# Allegro board xm650_board_file.brd
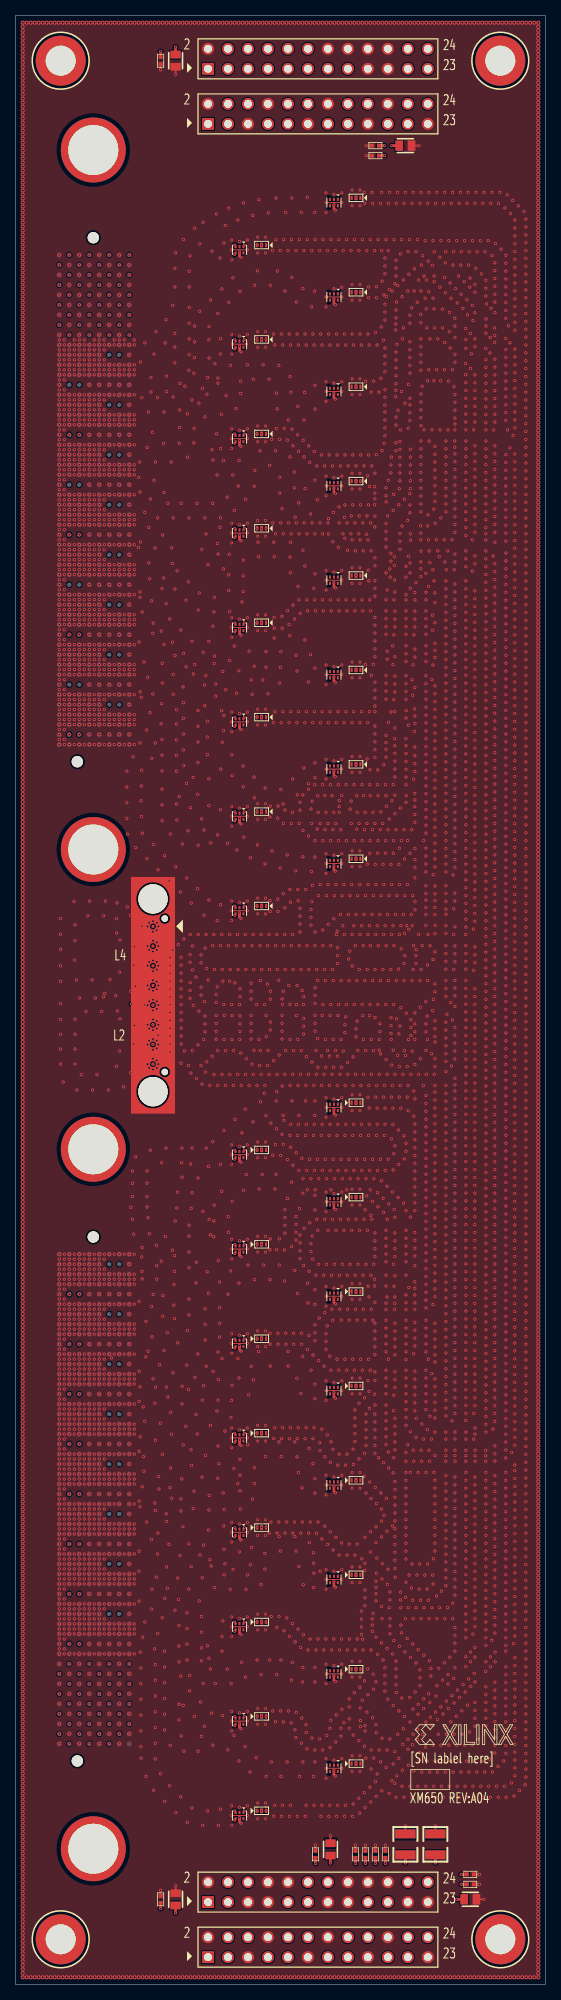
[diagram p0: board, top side]
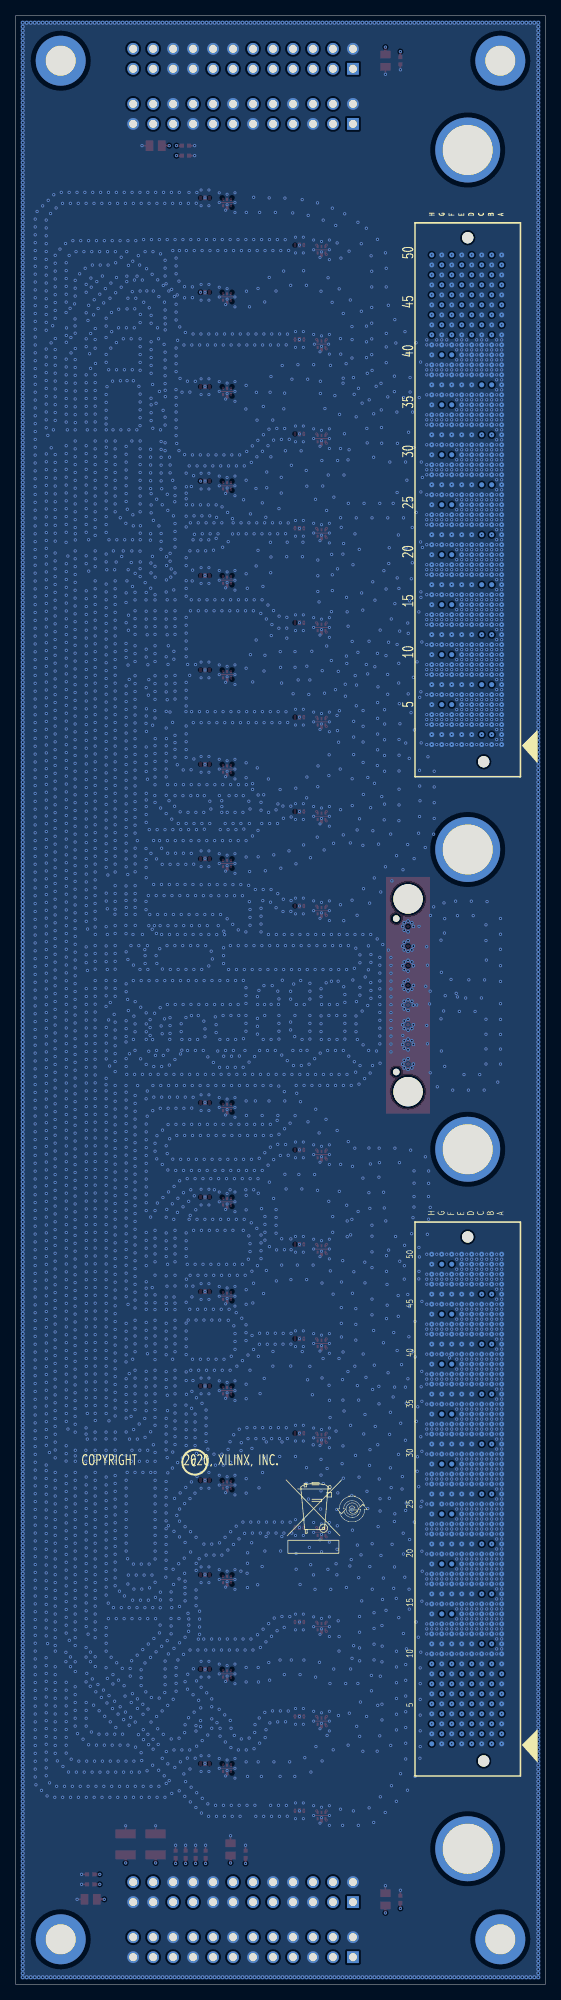
[diagram p1: board, bottom side, seen from below]

Outline 67.31 x 250.19 mm; copper layers: TOP, L02_RF_SIG, L03_GND, L04_RF_SIG, L05_GND, L06_PWR, L07_GND, L08_SIG, L09_GND, BOTTOM. Coordinates in mm from the lower left corner of the outline.
Outline path: 0,250.19 0,0 67.31,0 67.31,250.19 0,250.19

## Design rules (mm)
constraint set DEFAULT: min track width 0.318
net group TC_LAYER2_6INCH_: nets TC_LAYER2_6INCH_N TC_LAYER2_6INCH_P
net group TC_LAYER4_6INCH_: nets TC_LAYER4_6INCH_N TC_LAYER4_6INCH_P
net group ADC: nets ADC224_T0_CH0_P ADC224_T0_CH1_P ADC224_T0_CH2_P ADC224_T0_CH3_P ADC225_T1_CH0_P ADC225_T1_CH1_P ADC225_T1_CH2_P ADC225_T1_CH3_P ADC226_T2_CH0_P ADC226_T2_CH1_P ADC226_T2_CH2_P ADC226_T2_CH3_P ADC227_T3_CH0_P ADC227_T3_CH1_P ADC227_T3_CH2_P ADC227_T3_CH3_P
net group ADC_CH: nets ADC224_T0_CH0 ADC224_T0_CH1 ADC224_T0_CH2 ADC224_T0_CH3 ADC225_T1_CH0 ADC225_T1_CH1 ADC225_T1_CH2 ADC225_T1_CH3 ADC226_T2_CH0 ADC226_T2_CH1 ADC226_T2_CH2 ADC226_T2_CH3 ADC227_T3_CH0 ADC227_T3_CH1 ADC227_T3_CH2 ADC227_T3_CH3
net group ADC_DATA: nets ADC224_T0_CH0_N ADC224_T0_CH1_N ADC224_T0_CH2_N ADC224_T0_CH3_N ADC225_T1_CH0_N ADC225_T1_CH1_N ADC225_T1_CH2_N ADC225_T1_CH3_N ADC226_T2_CH0_N ADC226_T2_CH1_N ADC226_T2_CH2_N ADC226_T2_CH3_N ADC227_T3_CH0_N ADC227_T3_CH1_N ADC227_T3_CH2_N ADC227_T3_CH3_N
net group ADC_DIG: nets ADCIO_00 ADCIO_01 ADCIO_02 ADCIO_03 ADCIO_04 ADCIO_05 ADCIO_06 ADCIO_07 ADCIO_08 ADCIO_09 ADCIO_10 ADCIO_11 ADCIO_12 ADCIO_13 ADCIO_14 ADCIO_15 ADCIO_16 ADCIO_17 ADCIO_18 ADCIO_19
net group DAC: nets DAC228_T0_CH0_P DAC228_T0_CH1_P DAC228_T0_CH2_P DAC228_T0_CH3_P DAC229_T1_CH0_P DAC229_T1_CH1_P DAC229_T1_CH2_P DAC229_T1_CH3_P DAC230_T2_CH0_P DAC230_T2_CH1_P DAC230_T2_CH2_P DAC230_T2_CH3_P DAC231_T3_CH0_P DAC231_T3_CH1_P DAC231_T3_CH2_P DAC231_T3_CH3_P
net group DAC_DATA: nets DAC228_T0_CH0_N DAC228_T0_CH1_N DAC228_T0_CH2_N DAC228_T0_CH3_N DAC229_T1_CH0_N DAC229_T1_CH1_N DAC229_T1_CH2_N DAC229_T1_CH3_N DAC230_T2_CH0_N DAC230_T2_CH1_N DAC230_T2_CH2_N DAC230_T2_CH3_N DAC231_T3_CH0_N DAC231_T3_CH1_N DAC231_T3_CH2_N DAC231_T3_CH3_N
net group DAC_DIG: nets DACIO_00 DACIO_01 DACIO_02 DACIO_03 DACIO_04 DACIO_05 DACIO_06 DACIO_07 DACIO_08 DACIO_09 DACIO_10 DACIO_11 DACIO_12 DACIO_13 DACIO_14 DACIO_15 DACIO_16 DACIO_17 DACIO_18 DACIO_19

## Placement (name value [footprint] x y rotation side)
C25  10UF  [CAPC320X250X220]  49.53 17.78 90 top
C26  1UF  [CAPC100X50X60]  45.72 16.51 90 top
C27  1UF  [CAPC100X50X60]  44.45 16.51 90 top
C29  10UF  [CAPC200X125X155]  49.53 233.68 0 top
C30  1UF  [CAPC100X50X60]  45.72 233.68 180 top
C31  1UF  [CAPC100X50X60]  45.72 232.41 180 top
C32  10UF  [CAPC200X125X155]  20.32 244.47 270 top
C33  1UF  [CAPC100X50X60]  18.41 244.47 270 top
C34  10UF  [CAPC200X125X155]  20.32 10.79 90 top
C35  1UF  [CAPC100X50X60]  18.41 10.79 90 top
C36  10UF  [CAPC320X250X220]  53.34 17.78 90 top
C37  1UF  [CAPC100X50X60]  46.99 16.51 90 top
C38  1UF  [CAPC100X50X60]  43.18 16.51 90 top
C39  10UF  [CAPC200X125X155]  57.78 10.79 0 top
C40  1UF  [CAPC100X50X60]  57.78 12.7 0 top
C41  1UF  [CAPC100X50X60]  57.78 13.97 0 top
C42  10UF  [CAPC200X125X155]  40 17.14 90 top
C43  1UF  [CAPC100X50X60]  38.1 16.51 90 top
J21  -  [HDR_2X12]  24.44 236.44 0 top
J23  -  [HDR_2X12]  24.44 243.44 0 top
J44  -  [HDR_2X12]  24.44 3.45 0 top
J48  -  [HDR_2X12]  24.44 10.44 0 top
J49  -  [SAMTEC_LPAM_50_030_L_08_2_K_TR]  9.86 188.67 90 bottom
J50  -  [JSO_0415_01_PRESS_FIT]  9.86 144.22 0 top
J51  -  [JSO_0415_01_PRESS_FIT]  9.86 233.12 0 top
J52  -  [JSO_0415_01_PRESS_FIT]  9.86 17.22 0 top
J53  -  [JSO_0415_01_PRESS_FIT]  9.86 106.12 0 top
J55  -  [SAMTEC_LPAM_50_030_L_08_2_K_TR]  9.86 61.67 90 bottom
J56  COREHC2_8CH  [CON_CARLISE_COREH2C_8P]  17.44 134.44 270 top
MH1  MH_150_250  [MH_250H150]  5.71 244.47 0 top
MH2  MH_150_250  [MH_250H150]  61.59 244.47 0 top
MH3  MH_150_250  [MH_250H150]  61.59 5.71 0 top
MH4  MH_150_250  [MH_250H150]  5.71 5.71 0 top
NOREF  -  []  0 250.19 0 top
NOREF#2  -  []  67.31 0 90 top
NOREF#3  -  []  19.54 141.98 0 top
NOREF#4  -  []  655.72 288.7 0 top
U1  LFB184G70CT6F122  [FLTR_MURATA_LFB184G70CT6F122]  43.25 227.04 180 top
U2  LDB184G7BAAFA065  [BALUN_MURATA_LDB184G7BAAFA065]  40.44 226.44 270 top
U3  LFB184G70CT6F122  [FLTR_MURATA_LFB184G70CT6F122]  43.25 191.04 180 top
U4  LDB184G7BAAFA065  [BALUN_MURATA_LDB184G7BAAFA065]  40.44 190.44 270 top
U5  LFB184G70CT6F122  [FLTR_MURATA_LFB184G70CT6F122]  31.25 221.04 180 top
U6  LDB184G7BAAFA065  [BALUN_MURATA_LDB184G7BAAFA065]  28.44 220.44 270 top
U7  LFB184G70CT6F122  [FLTR_MURATA_LFB184G70CT6F122]  31.25 185.04 180 top
U8  LDB184G7BAAFA065  [BALUN_MURATA_LDB184G7BAAFA065]  28.44 184.44 270 top
U9  LFB184G70CT6F122  [FLTR_MURATA_LFB184G70CT6F122]  43.25 215.04 180 top
U10  LDB184G7BAAFA065  [BALUN_MURATA_LDB184G7BAAFA065]  40.44 214.44 270 top
U11  LFB184G70CT6F122  [FLTR_MURATA_LFB184G70CT6F122]  31.25 209.04 180 top
U12  LDB184G7BAAFA065  [BALUN_MURATA_LDB184G7BAAFA065]  28.44 208.44 270 top
U13  LFB184G70CT6F122  [FLTR_MURATA_LFB184G70CT6F122]  43.25 203.04 180 top
U14  LDB184G7BAAFA065  [BALUN_MURATA_LDB184G7BAAFA065]  40.44 202.44 270 top
U15  LFB184G70CT6F122  [FLTR_MURATA_LFB184G70CT6F122]  31.25 197.04 180 top
U16  LDB184G7BAAFA065  [BALUN_MURATA_LDB184G7BAAFA065]  28.44 196.44 270 top
U17  LFB184G70CT6F122  [FLTR_MURATA_LFB184G70CT6F122]  43.25 179.04 180 top
U18  LDB184G7BAAFA065  [BALUN_MURATA_LDB184G7BAAFA065]  40.44 178.44 270 top
U19  LFB184G70CT6F122  [FLTR_MURATA_LFB184G70CT6F122]  43.25 143.04 180 top
U20  LDB184G7BAAFA065  [BALUN_MURATA_LDB184G7BAAFA065]  40.44 142.44 270 top
U21  LFB184G70CT6F122  [FLTR_MURATA_LFB184G70CT6F122]  31.25 173.04 180 top
U22  LDB184G7BAAFA065  [BALUN_MURATA_LDB184G7BAAFA065]  28.44 172.44 270 top
U23  LFB184G70CT6F122  [FLTR_MURATA_LFB184G70CT6F122]  31.25 137.04 180 top
U24  LDB184G7BAAFA065  [BALUN_MURATA_LDB184G7BAAFA065]  28.44 136.44 270 top
U25  LFB184G70CT6F122  [FLTR_MURATA_LFB184G70CT6F122]  43.25 167.04 180 top
U26  LDB184G7BAAFA065  [BALUN_MURATA_LDB184G7BAAFA065]  40.44 166.44 270 top
U27  LFB184G70CT6F122  [FLTR_MURATA_LFB184G70CT6F122]  31.25 161.04 180 top
U28  LDB184G7BAAFA065  [BALUN_MURATA_LDB184G7BAAFA065]  28.44 160.44 270 top
U29  LFB184G70CT6F122  [FLTR_MURATA_LFB184G70CT6F122]  43.25 155.04 180 top
U30  LDB184G7BAAFA065  [BALUN_MURATA_LDB184G7BAAFA065]  40.44 154.44 270 top
U31  LFB184G70CT6F122  [FLTR_MURATA_LFB184G70CT6F122]  31.25 149.04 180 top
U32  LDB184G7BAAFA065  [BALUN_MURATA_LDB184G7BAAFA065]  28.44 148.44 270 top
U33  LFB184G70CT6F122  [FLTR_MURATA_LFB184G70CT6F122]  43.25 112.04 0 top
U34  LDB184G7BAAFA065  [BALUN_MURATA_LDB184G7BAAFA065]  40.44 111.44 270 top
U35  LFB184G70CT6F122  [FLTR_MURATA_LFB184G70CT6F122]  43.25 76.04 0 top
U36  LDB184G7BAAFA065  [BALUN_MURATA_LDB184G7BAAFA065]  40.44 75.44 270 top
U37  LFB184G70CT6F122  [FLTR_MURATA_LFB184G70CT6F122]  31.25 106.04 0 top
U38  LDB184G7BAAFA065  [BALUN_MURATA_LDB184G7BAAFA065]  28.44 105.44 270 top
U39  LFB184G70CT6F122  [FLTR_MURATA_LFB184G70CT6F122]  31.25 70.04 0 top
U40  LDB184G7BAAFA065  [BALUN_MURATA_LDB184G7BAAFA065]  28.44 69.44 270 top
U41  LFB184G70CT6F122  [FLTR_MURATA_LFB184G70CT6F122]  43.25 100.04 0 top
U42  LDB184G7BAAFA065  [BALUN_MURATA_LDB184G7BAAFA065]  40.44 99.44 270 top
U43  LFB184G70CT6F122  [FLTR_MURATA_LFB184G70CT6F122]  31.25 94.04 0 top
U44  LDB184G7BAAFA065  [BALUN_MURATA_LDB184G7BAAFA065]  28.44 93.44 270 top
U45  LFB184G70CT6F122  [FLTR_MURATA_LFB184G70CT6F122]  43.25 88.04 0 top
U46  LDB184G7BAAFA065  [BALUN_MURATA_LDB184G7BAAFA065]  40.44 87.44 270 top
U47  LFB184G70CT6F122  [FLTR_MURATA_LFB184G70CT6F122]  31.25 82.04 0 top
U48  LDB184G7BAAFA065  [BALUN_MURATA_LDB184G7BAAFA065]  28.44 81.44 270 top
U49  LFB184G70CT6F122  [FLTR_MURATA_LFB184G70CT6F122]  43.25 64.04 0 top
U50  LDB184G7BAAFA065  [BALUN_MURATA_LDB184G7BAAFA065]  40.44 63.44 270 top
U51  LFB184G70CT6F122  [FLTR_MURATA_LFB184G70CT6F122]  43.25 28.04 0 top
U52  LDB184G7BAAFA065  [BALUN_MURATA_LDB184G7BAAFA065]  40.44 27.44 270 top
U53  LFB184G70CT6F122  [FLTR_MURATA_LFB184G70CT6F122]  31.25 58.04 0 top
U54  LDB184G7BAAFA065  [BALUN_MURATA_LDB184G7BAAFA065]  28.44 57.44 270 top
U55  LFB184G70CT6F122  [FLTR_MURATA_LFB184G70CT6F122]  31.25 22.04 0 top
U56  LDB184G7BAAFA065  [BALUN_MURATA_LDB184G7BAAFA065]  28.44 21.44 270 top
U57  LFB184G70CT6F122  [FLTR_MURATA_LFB184G70CT6F122]  43.25 52.04 0 top
U58  LDB184G7BAAFA065  [BALUN_MURATA_LDB184G7BAAFA065]  40.44 51.44 270 top
U59  LFB184G70CT6F122  [FLTR_MURATA_LFB184G70CT6F122]  31.25 46.04 0 top
U60  LDB184G7BAAFA065  [BALUN_MURATA_LDB184G7BAAFA065]  28.44 45.44 270 top
U61  LFB184G70CT6F122  [FLTR_MURATA_LFB184G70CT6F122]  31.25 34.04 0 top
U62  LDB184G7BAAFA065  [BALUN_MURATA_LDB184G7BAAFA065]  28.44 33.44 270 top
U63  LFB184G70CT6F122  [FLTR_MURATA_LFB184G70CT6F122]  43.25 40.04 0 top
U64  LDB184G7BAAFA065  [BALUN_MURATA_LDB184G7BAAFA065]  40.44 39.44 270 top

## Library data of the parts
C25 = CAP_NP: alternate symbols: (CAPC320X250X220RND); signal model: CAP_NP_CAPC60X30X40_0.1UF_CAPC60X30X40RND_0.1UF
C26 C27 C31 C37 C40 = CAP_NP: alternate symbols: (CAPC100X50X60RND); signal model: DEFAULT_CAPACITOR_100000pF_2_1
C29 C32 C34 C39 = CAP_NP: alternate symbols: (CAPC200X125X155RND)
C30 C33 C35 C38 = CAP_NP: alternate symbols: (CAPC100X50X60RND)
C36 = CAP_NP: alternate symbols: (CAPC320X250X220RND)
C41 = CAP_NP: alternate symbols: (CAPC100X50X60RND); signal model: DEFAULT_CAPACITOR_1e+06pF_2_1
C42 = CAP_NP: alternate symbols: (CAPC200X125X155RND); signal model: DEFAULT_CAPACITOR_100000pF_2_1
C43 = CAP_NP: alternate symbols: (CAPC100X50X60RND); signal model: DEFAULT_CAPACITOR_1000pF_2_1
J21 J23 J44 J48 = HDR_2X12
J49 J55 = LPAM-50-01.0-L-08-2-K-TR
J50-J53 = HOLE_JSO
J56 = COREHC2_8CH
MH1-MH4 = HOLE
U1 U3 U5 U7 U9 U11 U13 U15 U17 U19 U21 U23 U25 U27 U29 U31 U33 U35 U37 U39 U41 U43 U45 U47 U49 U51 U53 U55 U57 U59 U61 U63 = BP_FILTER
U2 U4 U6 U8 U10 U12 U14 U16 U18 U20 U22 U24 U26 U28 U30 U32 U34 U36 U38 U40 U42 U44 U46 U48 U50 U52 U54 U56 U58 U60 U62 U64 = LDB184G7BAAFA065

## Footprints (pads in the part's own frame, mm; a bottom-side part is the same pattern mirrored in y, then rotated)
BALUN_MURATA_LDB184G7BAAFA065
  rect 0.4x0.25 smd: 1(-0.4,0.5) 2(-0.4,0) 3(-0.4,-0.5) 4(0.4,-0.5) 5(0.4,0) 6(0.4,0.5)
CAPC100X50X60
  rect 0.5x0.51 smd: 1(-0.45,0) 2(0.45,0)
CAPC200X125X155
  rect 0.98x1.32 smd: 1(-0.78,0) 2(0.78,0)
CAPC320X250X220
  rect 1.145x2.59 smd: 1(-1.333,0) 2(1.333,0)
CON_CARLISE_COREH2C_8P
  round 3.734 hole 3.734 unplated: (-3.5,0) (21,0)
  round 0.838 hole 0.838 unplated: (-1,1.5) (18.5,1.5)
  round 0.406 smd: 1(0,0) 2(2.5,0) 3(5,0) 4(7.5,0) 5(10,0) 6(12.5,0) 7(15,0) 8(17.5,0)
  round 0.1 smd: 9(1.25,1.25) 10(16.25,1.25)
FLTR_MURATA_LFB184G70CT6F122
  rect 0.28x0.55 smd: 1(-0.56,0) 3(0.56,0)
  rect 0.4x0.6 smd: 2(0,0)
HDR_2X12
  rect 1.5x1.5 hole 1.016: 1(0,0)
  round 1.5 hole 1.016: 2(0,2.54) 3(2.54,0) 4(2.54,2.54) 5(5.08,0) 6(5.08,2.54) 7(7.62,0) 8(7.62,2.54) 9(10.16,0) 10(10.16,2.54) 11(12.7,0) 12(12.7,2.54) 13(15.24,0) 14(15.24,2.54) 15(17.78,0) 16(17.78,2.54) 17(20.32,0) 18(20.32,2.54) 19(22.86,0) 20(22.86,2.54) 21(25.4,0) 22(25.4,2.54) 23(27.94,0) 24(27.94,2.54)
JSO_0415_01_PRESS_FIT
  round 8.255 hole 6.35: 1(0,0)
MH_250H150
  round 6.35 hole 3.81: 1(0,0)
SAMTEC_LPAM_50_030_L_08_2_K_TR
  round 1.44 hole 1.448 unplated: (-33.295,-2.03) (33.305,0)
  round 0.64 smd: A1(-31.115,-4.32) A2(-29.845,-4.32) A3(-28.575,-4.32) A4(-27.305,-4.32) A5(-26.035,-4.32) A6(-24.765,-4.32) A7(-23.495,-4.32) A8(-22.225,-4.32) A9(-20.955,-4.32) A10(-19.685,-4.32) A11(-18.415,-4.32) A12(-17.145,-4.32) A13(-15.875,-4.32) A14(-14.605,-4.32) A15(-13.335,-4.32) A16(-12.065,-4.32) A17(-10.795,-4.32) A18(-9.525,-4.32) A19(-8.255,-4.32) A20(-6.985,-4.32) A21(-5.715,-4.32) A22(-4.445,-4.32) A23(-3.175,-4.32) A24(-1.905,-4.32) A25(-0.635,-4.32) A26(0.635,-4.32) A27(1.905,-4.32) A28(3.175,-4.32) A29(4.445,-4.32) A30(5.715,-4.32) A31(6.985,-4.32) A32(8.255,-4.32) A33(9.525,-4.32) A34(10.795,-4.32) A35(12.065,-4.32) A36(13.335,-4.32) A37(14.605,-4.32) A38(15.875,-4.32) A39(17.145,-4.32) A40(18.415,-4.32) A41(19.685,-4.32) A42(20.955,-4.32) A43(22.225,-4.32) A44(23.495,-4.32) A45(24.765,-4.32) A46(26.035,-4.32) A47(27.305,-4.32) A48(28.575,-4.32) A49(29.845,-4.32) A50(31.115,-4.32) B1(-31.115,-3.05) B2(-29.845,-3.05) B3(-28.575,-3.05) B4(-27.305,-3.05) B5(-26.035,-3.05) B6(-24.765,-3.05) B7(-23.495,-3.05) B8(-22.225,-3.05) B9(-20.955,-3.05) B10(-19.685,-3.05) B11(-18.415,-3.05) B12(-17.145,-3.05) B13(-15.875,-3.05) B14(-14.605,-3.05) B15(-13.335,-3.05) B16(-12.065,-3.05) B17(-10.795,-3.05) B18(-9.525,-3.05) B19(-8.255,-3.05) B20(-6.985,-3.05) B21(-5.715,-3.05) B22(-4.445,-3.05) B23(-3.175,-3.05) B24(-1.905,-3.05) B25(-0.635,-3.05) B26(0.635,-3.05) B27(1.905,-3.05) B28(3.175,-3.05) B29(4.445,-3.05) B30(5.715,-3.05) B31(6.985,-3.05) B32(8.255,-3.05) B33(9.525,-3.05) B34(10.795,-3.05) B35(12.065,-3.05) B36(13.335,-3.05) B37(14.605,-3.05) B38(15.875,-3.05) B39(17.145,-3.05) B40(18.415,-3.05) B41(19.685,-3.05) B42(20.955,-3.05) B43(22.225,-3.05) B44(23.495,-3.05) B45(24.765,-3.05) B46(26.035,-3.05) B47(27.305,-3.05) B48(28.575,-3.05) B49(29.845,-3.05) B50(31.115,-3.05) C1(-31.115,-1.78) C2(-29.845,-1.78) C3(-28.575,-1.78) C4(-27.305,-1.78) C5(-26.035,-1.78) C6(-24.765,-1.78) C7(-23.495,-1.78) C8(-22.225,-1.78) C9(-20.955,-1.78) C10(-19.685,-1.78) C11(-18.415,-1.78) C12(-17.145,-1.78) C13(-15.875,-1.78) C14(-14.605,-1.78) C15(-13.335,-1.78) C16(-12.065,-1.78) C17(-10.795,-1.78) C18(-9.525,-1.78) C19(-8.255,-1.78) C20(-6.985,-1.78) C21(-5.715,-1.78) C22(-4.445,-1.78) C23(-3.175,-1.78) C24(-1.905,-1.78) C25(-0.635,-1.78) C26(0.635,-1.78) C27(1.905,-1.78) C28(3.175,-1.78) C29(4.445,-1.78) C30(5.715,-1.78) C31(6.985,-1.78) C32(8.255,-1.78) C33(9.525,-1.78) C34(10.795,-1.78) C35(12.065,-1.78) C36(13.335,-1.78) C37(14.605,-1.78) C38(15.875,-1.78) C39(17.145,-1.78) C40(18.415,-1.78) C41(19.685,-1.78) C42(20.955,-1.78) C43(22.225,-1.78) C44(23.495,-1.78) C45(24.765,-1.78) C46(26.035,-1.78) C47(27.305,-1.78) C48(28.575,-1.78) C49(29.845,-1.78) C50(31.115,-1.78) D1(-31.115,-0.51) D2(-29.845,-0.51) D3(-28.575,-0.51) D4(-27.305,-0.51) D5(-26.035,-0.51) D6(-24.765,-0.51) D7(-23.495,-0.51) D8(-22.225,-0.51) D9(-20.955,-0.51) D10(-19.685,-0.51) D11(-18.415,-0.51) D12(-17.145,-0.51) D13(-15.875,-0.51) D14(-14.605,-0.51) D15(-13.335,-0.51) D16(-12.065,-0.51) D17(-10.795,-0.51) D18(-9.525,-0.51) D19(-8.255,-0.51) D20(-6.985,-0.51) D21(-5.715,-0.51) D22(-4.445,-0.51) D23(-3.175,-0.51) D24(-1.905,-0.51) D25(-0.635,-0.51) D26(0.635,-0.51) D27(1.905,-0.51) D28(3.175,-0.51) D29(4.445,-0.51) D30(5.715,-0.51) D31(6.985,-0.51) D32(8.255,-0.51) D33(9.525,-0.51) D34(10.795,-0.51) D35(12.065,-0.51) D36(13.335,-0.51) D37(14.605,-0.51) D38(15.875,-0.51) D39(17.145,-0.51) D40(18.415,-0.51) D41(19.685,-0.51) D42(20.955,-0.51) D43(22.225,-0.51) D44(23.495,-0.51) D45(24.765,-0.51) D46(26.035,-0.51) D47(27.305,-0.51) D48(28.575,-0.51) D49(29.845,-0.51) D50(31.115,-0.51) E1(-31.115,0.76) E2(-29.845,0.76) E3(-28.575,0.76) E4(-27.305,0.76) E5(-26.035,0.76) E6(-24.765,0.76) E7(-23.495,0.76) E8(-22.225,0.76) E9(-20.955,0.76) E10(-19.685,0.76) E11(-18.415,0.76) E12(-17.145,0.76) E13(-15.875,0.76) E14(-14.605,0.76) E15(-13.335,0.76) E16(-12.065,0.76) E17(-10.795,0.76) E18(-9.525,0.76) E19(-8.255,0.76) E20(-6.985,0.76) E21(-5.715,0.76) E22(-4.445,0.76) E23(-3.175,0.76) E24(-1.905,0.76) E25(-0.635,0.76) E26(0.635,0.76) E27(1.905,0.76) E28(3.175,0.76) E29(4.445,0.76) E30(5.715,0.76) E31(6.985,0.76) E32(8.255,0.76) E33(9.525,0.76) E34(10.795,0.76) E35(12.065,0.76) E36(13.335,0.76) E37(14.605,0.76) E38(15.875,0.76) E39(17.145,0.76) E40(18.415,0.76) E41(19.685,0.76) E42(20.955,0.76) E43(22.225,0.76) E44(23.495,0.76) E45(24.765,0.76) E46(26.035,0.76) E47(27.305,0.76) E48(28.575,0.76) E49(29.845,0.76) E50(31.115,0.76) F1(-31.115,2.03) F2(-29.845,2.03) F3(-28.575,2.03) F4(-27.305,2.03) F5(-26.035,2.03) F6(-24.765,2.03) F7(-23.495,2.03) F8(-22.225,2.03) F9(-20.955,2.03) F10(-19.685,2.03) F11(-18.415,2.03) F12(-17.145,2.03) F13(-15.875,2.03) F14(-14.605,2.03) F15(-13.335,2.03) F16(-12.065,2.03) F17(-10.795,2.03) F18(-9.525,2.03) F19(-8.255,2.03) F20(-6.985,2.03) F21(-5.715,2.03) F22(-4.445,2.03) F23(-3.175,2.03) F24(-1.905,2.03) F25(-0.635,2.03) F26(0.635,2.03) F27(1.905,2.03) F28(3.175,2.03) F29(4.445,2.03) F30(5.715,2.03) F31(6.985,2.03) F32(8.255,2.03) F33(9.525,2.03) F34(10.795,2.03) F35(12.065,2.03) F36(13.335,2.03) F37(14.605,2.03) F38(15.875,2.03) F39(17.145,2.03) F40(18.415,2.03) F41(19.685,2.03) F42(20.955,2.03) F43(22.225,2.03) F44(23.495,2.03) F45(24.765,2.03) F46(26.035,2.03) F47(27.305,2.03) F48(28.575,2.03) F49(29.845,2.03) F50(31.115,2.03) G1(-31.115,3.3) G2(-29.845,3.3) G3(-28.575,3.3) G4(-27.305,3.3) G5(-26.035,3.3) G6(-24.765,3.3) G7(-23.495,3.3) G8(-22.225,3.3) G9(-20.955,3.3) G10(-19.685,3.3) G11(-18.415,3.3) G12(-17.145,3.3) G13(-15.875,3.3) G14(-14.605,3.3) G15(-13.335,3.3) G16(-12.065,3.3) G17(-10.795,3.3) G18(-9.525,3.3) G19(-8.255,3.3) G20(-6.985,3.3) G21(-5.715,3.3) G22(-4.445,3.3) G23(-3.175,3.3) G24(-1.905,3.3) G25(-0.635,3.3) G26(0.635,3.3) G27(1.905,3.3) G28(3.175,3.3) G29(4.445,3.3) G30(5.715,3.3) G31(6.985,3.3) G32(8.255,3.3) G33(9.525,3.3) G34(10.795,3.3) G35(12.065,3.3) G36(13.335,3.3) G37(14.605,3.3) G38(15.875,3.3) G39(17.145,3.3) G40(18.415,3.3) G41(19.685,3.3) G42(20.955,3.3) G43(22.225,3.3) G44(23.495,3.3) G45(24.765,3.3) G46(26.035,3.3) G47(27.305,3.3) G48(28.575,3.3) G49(29.845,3.3) G50(31.115,3.3) H1(-31.115,4.57) H2(-29.845,4.57) H3(-28.575,4.57) H4(-27.305,4.57) H5(-26.035,4.57) H6(-24.765,4.57) H7(-23.495,4.57) H8(-22.225,4.57) H9(-20.955,4.57) H10(-19.685,4.57) H11(-18.415,4.57) H12(-17.145,4.57) H13(-15.875,4.57) H14(-14.605,4.57) H15(-13.335,4.57) H16(-12.065,4.57) H17(-10.795,4.57) H18(-9.525,4.57) H19(-8.255,4.57) H20(-6.985,4.57) H21(-5.715,4.57) H22(-4.445,4.57) H23(-3.175,4.57) H24(-1.905,4.57) H25(-0.635,4.57) H26(0.635,4.57) H27(1.905,4.57) H28(3.175,4.57) H29(4.445,4.57) H30(5.715,4.57) H31(6.985,4.57) H32(8.255,4.57) H33(9.525,4.57) H34(10.795,4.57) H35(12.065,4.57) H36(13.335,4.57) H37(14.605,4.57) H38(15.875,4.57) H39(17.145,4.57) H40(18.415,4.57) H41(19.685,4.57) H42(20.955,4.57) H43(22.225,4.57) H44(23.495,4.57) H45(24.765,4.57) H46(26.035,4.57) H47(27.305,4.57) H48(28.575,4.57) H49(29.845,4.57) H50(31.115,4.57)

## Nets
GND: C25.2 C26.2 C27.2 C29.2 C30.2 C31.2 C32.2 C33.2 C34.2 C35.2 C36.2 C37.2 C38.2 C39.2 C40.2 C41.2 C42.2 C43.2 J21.2 J21.5 J21.8 J21.11 J21.14 J21.17 J21.20 J21.23 J23.2 J23.14 J23.16 J23.17 J23.18 J23.19 J23.20 J44.2 J44.5 J44.8 J44.11 J44.14 J44.17 J44.20 J44.23 J48.2 J48.5 J48.7 J48.8 J48.10 J48.13 J48.15 J48.16 J48.18 J48.20 J48.21 J48.23 J49.A1 J49.A2 J49.A3 J49.A4 J49.A5 J49.A6 J49.A7 J49.A8 J49.A9 J49.A10 J49.A11 J49.A12 J49.A13 J49.A14 J49.A15 J49.A16 J49.A17 J49.A18 J49.A19 J49.A20 J49.A21 J49.A22 J49.A23 J49.A24 J49.A25 J49.A26 J49.A27 J49.A28 J49.A29 J49.A30 J49.A31 J49.A32 J49.A33 J49.A34 J49.A35 J49.A36 J49.A37 J49.A38 J49.A39 J49.A40 J49.A41 J49.A42 J49.A44 J49.A46 J49.A48 J49.A50 J49.B1 J49.B3 J49.B4 J49.B5 J49.B6 J49.B8 J49.B9 J49.B10 J49.B11 J49.B13 J49.B14 J49.B15 J49.B16 J49.B18 J49.B19 J49.B20 J49.B21 J49.B23 J49.B24 J49.B25 J49.B26 J49.B28 J49.B29 J49.B30 J49.B31 J49.B33 J49.B34 J49.B35 J49.B36 J49.B38 J49.B39 J49.B40 J49.B41 J49.B43 J49.B45 J49.B47 J49.B49 J49.C1 J49.C3 J49.C4 J49.C5 J49.C6 J49.C8 J49.C9 J49.C10 J49.C11 J49.C13 J49.C14 J49.C15 J49.C16 J49.C18 J49.C19 J49.C20 J49.C21 J49.C23 J49.C24 J49.C25 J49.C26 J49.C28 J49.C29 J49.C30 J49.C31 J49.C33 J49.C34 J49.C35 J49.C36 J49.C38 J49.C39 J49.C40 J49.C41 J49.C42 J49.C44 J49.C46 J49.C48 J49.C50 J49.D1 J49.D2 J49.D3 J49.D4 J49.D5 J49.D6 J49.D7 J49.D8 J49.D9 J49.D10 J49.D11 J49.D12 J49.D13 J49.D14 J49.D15 J49.D16 J49.D17 J49.D18 J49.D19 J49.D20 J49.D21 J49.D22 J49.D23 J49.D24 J49.D25 J49.D26 J49.D27 J49.D28 J49.D29 J49.D30 J49.D31 J49.D32 J49.D33 J49.D34 J49.D35 J49.D36 J49.D37 J49.D38 J49.D39 J49.D40 J49.D41 J49.D43 J49.D45 J49.D47 J49.D49 J49.E1 J49.E2 J49.E3 J49.E4 J49.E5 J49.E6 J49.E7 J49.E8 J49.E9 J49.E10 J49.E11 J49.E12 J49.E13 J49.E14 J49.E15 J49.E16 J49.E17 J49.E18 J49.E19 J49.E20 J49.E21 J49.E22 J49.E23 J49.E24 J49.E25 J49.E26 J49.E27 J49.E28 J49.E29 J49.E30 J49.E31 J49.E32 J49.E33 J49.E34 J49.E35 J49.E36 J49.E37 J49.E38 J49.E39 J49.E40 J49.E41 J49.E42 J49.E44 J49.E46 J49.E48 J49.E50 J49.F1 J49.F2 J49.F3 J49.F4 J49.F6 J49.F7 J49.F8 J49.F9 J49.F11 J49.F12 J49.F13 J49.F14 J49.F16 J49.F17 J49.F18 J49.F19 J49.F21 J49.F22 J49.F23 J49.F24 J49.F26 J49.F27 J49.F28 J49.F29 J49.F31 J49.F32 J49.F33 J49.F34 J49.F36 J49.F37 J49.F38 J49.F39 J49.F41 J49.F43 J49.F45 J49.F47 J49.F49 J49.G1 J49.G2 J49.G3 J49.G4 J49.G6 J49.G7 J49.G8 J49.G9 J49.G11 J49.G12 J49.G13 J49.G14 J49.G16 J49.G17 J49.G18 J49.G19 J49.G21 J49.G22 J49.G23 J49.G24 J49.G26 J49.G27 J49.G28 J49.G29 J49.G31 J49.G32 J49.G33 J49.G34 J49.G36 J49.G37 J49.G38 J49.G39 J49.G41 J49.G42 J49.G44 J49.G46 J49.G48 J49.G50 J49.H1 J49.H2 J49.H3 J49.H4 J49.H5 J49.H6 J49.H7 J49.H8 J49.H9(9) J49.H10 J49.H11 J49.H12 J49.H13 J49.H14 J49.H15 J49.H16 J49.H17 J49.H18 J49.H19 J49.H20 J49.H21 J49.H22 J49.H23 J49.H24 J49.H25 J49.H26 J49.H27 J49.H28 J49.H29 J49.H30 J49.H31 J49.H32 J49.H33 J49.H34 J49.H35 J49.H36 J49.H37 J49.H38 J49.H39 J49.H40 J49.H41 J49.H43 J49.H45 J49.H47 J49.H49 J55.A1 J55.A3 J55.A5 J55.A7 J55.A9 J55.A10 J55.A11 J55.A12 J55.A13 J55.A14 J55.A15 J55.A16 J55.A17 J55.A18 J55.A19 J55.A20 J55.A21 J55.A22 J55.A23 J55.A24 J55.A25 J55.A26 J55.A27 J55.A28 J55.A29 J55.A30 J55.A31 J55.A32 J55.A33 J55.A34 J55.A35 J55.A36 J55.A37 J55.A38 J55.A39 J55.A40 J55.A41 J55.A42 J55.A43 J55.A44 J55.A45 J55.A46 J55.A47 J55.A48 J55.A49 J55.A50 J55.B2 J55.B4 J55.B6 J55.B8 J55.B10 J55.B12 J55.B13 J55.B14 J55.B15 J55.B17 J55.B18 J55.B19 J55.B20 J55.B22 J55.B23 J55.B24 J55.B25 J55.B27 J55.B28 J55.B29 J55.B30 J55.B32 J55.B33 J55.B34 J55.B35 J55.B37 J55.B38 J55.B39 J55.B40 J55.B42 J55.B43 J55.B44 J55.B45 J55.B47 J55.B48 J55.B49 J55.B50 J55.C1 J55.C3 J55.C5 J55.C7 J55.C9 J55.C10 J55.C12 J55.C13 J55.C14 J55.C15 J55.C17 J55.C18 J55.C19 J55.C20 J55.C22 J55.C23 J55.C24 J55.C25 J55.C27 J55.C28 J55.C29 J55.C30 J55.C32 J55.C33 J55.C34 J55.C35 J55.C37 J55.C38 J55.C39 J55.C40 J55.C42 J55.C43 J55.C44 J55.C45 J55.C47 J55.C48 J55.C49 J55.C50 J55.D2 J55.D4 J55.D6 J55.D8 J55.D10 J55.D11 J55.D12 J55.D13 J55.D14 J55.D15 J55.D16 J55.D17 J55.D18 J55.D19 J55.D20 J55.D21 J55.D22 J55.D23 J55.D24 J55.D25 J55.D26 J55.D27 J55.D28 J55.D29 J55.D30 J55.D31 J55.D32 J55.D33 J55.D34 J55.D35 J55.D36 J55.D37 J55.D38 J55.D39 J55.D40 J55.D41 J55.D42 J55.D43 J55.D44 J55.D45 J55.D46 J55.D47 J55.D48 J55.D49 J55.D50 J55.E1 J55.E3 J55.E5 J55.E7 J55.E9 J55.E10 J55.E11 J55.E12 J55.E13 J55.E14 J55.E15 J55.E16 J55.E17 J55.E18 J55.E19 J55.E20 J55.E21 J55.E22 J55.E23 J55.E24 J55.E25 J55.E26 J55.E27 J55.E28 J55.E29 J55.E30 J55.E31 J55.E32 J55.E33 J55.E34 J55.E35 J55.E36 J55.E37 J55.E38 J55.E39 J55.E40 J55.E41 J55.E42 J55.E43 J55.E44 J55.E45 J55.E46 J55.E47 J55.E48 J55.E49 J55.E50 J55.F2 J55.F4 J55.F6 J55.F8 J55.F10 J55.F11 J55.F12 J55.F13 J55.F15 J55.F16 J55.F17 J55.F18 J55.F20 J55.F21 J55.F22 J55.F23 J55.F25 J55.F26 J55.F27 J55.F28 J55.F30 J55.F31 J55.F32 J55.F33 J55.F35 J55.F36 J55.F37 J55.F38 J55.F40 J55.F41 J55.F42 J55.F43 J55.F45 J55.F46 J55.F47 J55.F48 J55.F50 J55.G1 J55.G3 J55.G5 J55.G7 J55.G9 J55.G10 J55.G11 J55.G12 J55.G13 J55.G15 J55.G16 J55.G17 J55.G18 J55.G20 J55.G21 J55.G22 J55.G23 J55.G25 J55.G26 J55.G27 J55.G28 J55.G30 J55.G31 J55.G32 J55.G33 J55.G35 J55.G36 J55.G37 J55.G38 J55.G40 J55.G41 J55.G42 J55.G43 J55.G45 J55.G46 J55.G47 J55.G48 J55.G50 J55.H2 J55.H4 J55.H6 J55.H8 J55.H10 J55.H11 J55.H12 J55.H13 J55.H14 J55.H15 J55.H16 J55.H17 J55.H18 J55.H19 J55.H20 J55.H21 J55.H22 J55.H23 J55.H24 J55.H25 J55.H26 J55.H27 J55.H28 J55.H29 J55.H30 J55.H31 J55.H32 J55.H33 J55.H34 J55.H35 J55.H36 J55.H37 J55.H38 J55.H39 J55.H40 J55.H41 J55.H42 J55.H43 J55.H44 J55.H45 J55.H46 J55.H47 J55.H48 J55.H49 J55.H50 J56.9 J56.10 U1.2 U2.5 U3.2 U4.5 U5.2 U6.5 U7.2 U8.5 U9.2 U10.5 U11.2 U12.5 U13.2 U14.5 U15.2 U16.5 U17.2 U18.5 U19.2 U20.5 U21.2 U22.5 U23.2 U24.5 U25.2 U26.5 U27.2 U28.5 U29.2 U30.5 U31.2 U32.5 U33.2 U34.5 U35.2 U36.5 U37.2 U38.5 U39.2 U40.5 U41.2 U42.5 U43.2 U44.5 U45.2 U46.5 U47.2 U48.5 U49.2 U50.5 U51.2 U52.5 U53.2 U54.5 U55.2 U56.5 U57.2 U58.5 U59.2 U60.5 U61.2 U62.5 U63.2 U64.5
VCC12_SW: C25.1 C26.1 C27.1 C36.1 C37.1 C38.1 J48.22 J48.24 J55.A6 J55.B7 J55.C6 J55.D7 J55.E6 J55.F7 J55.G6 J55.H7
ADC224_T0_CH0: U1.1 U51.3(OUT)
ADC224_T0_CH0_N: J49.F40 U2.4(Q2)
ADC224_T0_CH0_P: J49.G40 U2.3
ADC224_T0_CH1: U5.1 U55.3(OUT)
ADC224_T0_CH1_N: J49.B37 U6.4(Q2)
ADC224_T0_CH1_P: J49.C37 U6.3
ADC224_T0_CH2: U9.1 U63.3(OUT)
ADC224_T0_CH2_N: J49.F35 U10.4(Q2)
ADC224_T0_CH2_P: J49.G35 U10.3
ADC224_T0_CH3: U11.1 U61.3(OUT)
ADC224_T0_CH3_N: J49.B32 U12.4(Q2)
ADC224_T0_CH3_P: J49.C32 U12.3
ADC225_T1_CH0: U13.1 U57.3(OUT)
ADC225_T1_CH0_N: J49.F30 U14.4(Q2)
ADC225_T1_CH0_P: J49.G30 U14.3
ADC225_T1_CH1: U15.1 U59.3(OUT)
ADC225_T1_CH1_N: J49.B27 U16.4(Q2)
ADC225_T1_CH1_P: J49.C27 U16.3
ADC225_T1_CH2: U3.1 U49.3(OUT)
ADC225_T1_CH2_N: J49.F25 U4.4(Q2)
ADC225_T1_CH2_P: J49.G25 U4.3
ADC225_T1_CH3: U7.1 U53.3(OUT)
ADC225_T1_CH3_N: J49.B22 U8.4(Q2)
ADC225_T1_CH3_P: J49.C22 U8.3
ADC226_T2_CH0: U17.1 U35.3(OUT)
ADC226_T2_CH0_N: J49.F20 U18.4(Q2)
ADC226_T2_CH0_P: J49.G20 U18.3
ADC226_T2_CH1: U21.1 U39.3(OUT)
ADC226_T2_CH1_N: J49.B17 U22.4(Q2)
ADC226_T2_CH1_P: J49.C17 U22.3
ADC226_T2_CH2: U25.1 U45.3(OUT)
ADC226_T2_CH2_N: J49.F15 U26.4(Q2)
ADC226_T2_CH2_P: J49.G15 U26.3
ADC226_T2_CH3: U27.1 U47.3(OUT)
ADC226_T2_CH3_N: J49.B12 U28.4(Q2)
ADC226_T2_CH3_P: J49.C12 U28.3
ADC227_T3_CH0: U29.1 U41.3(OUT)
ADC227_T3_CH0_N: J49.F10 U30.4(Q2)
ADC227_T3_CH0_P: J49.G10 U30.3
ADC227_T3_CH1: U31.1 U43.3(OUT)
ADC227_T3_CH1_N: J49.B7 U32.4(Q2)
ADC227_T3_CH1_P: J49.C7 U32.3
ADC227_T3_CH2: U19.1 U33.3(OUT)
ADC227_T3_CH2_N: J49.F5 U20.4(Q2)
ADC227_T3_CH2_P: J49.G5 U20.3
ADC227_T3_CH3: U23.1 U37.3(OUT)
ADC227_T3_CH3_N: J49.B2 U24.4(Q2)
ADC227_T3_CH3_P: J49.C2 U24.3
ADCIO_00: J21.1 J49.A47
ADCIO_01: J21.3 J49.A49
ADCIO_02: J21.7 J49.B46
ADCIO_03: J21.9(P9) J49.B48
ADCIO_04: J21.13 J49.C47
ADCIO_05: J21.15 J49.C49
ADCIO_06: J21.19 J49.D46
ADCIO_07: J21.21 J49.D48
ADCIO_08: J23.1 J49.E47
ADCIO_09: J23.3 J49.E49
ADCIO_10: J21.4 J49.F46
ADCIO_11: J21.6 J49.F48
ADCIO_12: J21.10 J49.G47
ADCIO_13: J21.12 J49.G49
ADCIO_14: J21.16 J49.H46
ADCIO_15: J21.18 J49.H48
ADCIO_16: J21.22
ADCIO_17: J21.24
ADCIO_18: J23.4
ADCIO_19: J23.6
BALUN_NC1: U2.2
BALUN_NC2: U6.2
BALUN_NC3: U10.2
BALUN_NC4: U12.2
BALUN_NC5: U14.2
BALUN_NC6: U16.2
BALUN_NC7: U4.2
BALUN_NC8: U8.2
BALUN_NC9: U18.2
BALUN_NC10: U22.2
BALUN_NC11: U26.2
BALUN_NC12: U28.2
BALUN_NC13: U30.2
BALUN_NC14: U32.2
BALUN_NC15: U20.2
BALUN_NC16: U24.2
BALUN_NC17: U34.2
BALUN_NC18: U38.2
BALUN_NC19: U42.2
BALUN_NC20: U44.2
BALUN_NC21: U46.2
BALUN_NC22: U48.2
BALUN_NC23: U36.2
BALUN_NC24: U40.2
BALUN_NC25: U50.2
BALUN_NC26: U54.2
BALUN_NC27: U58.2
BALUN_NC28: U60.2
BALUN_NC29: U64.2
BALUN_NC30: U62.2
BALUN_NC31: U52.2
BALUN_NC32: U56.2
DAC228_T0_CH0_N: J55.F49 U34.4(Q2)
DAC228_T0_CH0_P: J55.G49 U34.3
DAC228_T0_CH1_N: J55.B46 U38.4(Q2)
DAC228_T0_CH1_P: J55.C46 U38.3
DAC228_T0_CH2_N: J55.F44 U42.4(Q2)
DAC228_T0_CH2_P: J55.G44 U42.3
DAC228_T0_CH3_N: J55.B41 U44.4(Q2)
DAC228_T0_CH3_P: J55.C41 U44.3
DAC229_T1_CH0_N: J55.F39 U46.4(Q2)
DAC229_T1_CH0_P: J55.G39 U46.3
DAC229_T1_CH1_N: J55.B36 U48.4(Q2)
DAC229_T1_CH1_P: J55.C36 U48.3
DAC229_T1_CH2_N: J55.F34 U36.4(Q2)
DAC229_T1_CH2_P: J55.G34 U36.3
DAC229_T1_CH3_N: J55.B31 U40.4(Q2)
DAC229_T1_CH3_P: J55.C31 U40.3
DAC230_T2_CH0_N: J55.F29 U50.4(Q2)
DAC230_T2_CH0_P: J55.G29 U50.3
DAC230_T2_CH1_N: J55.B26 U54.4(Q2)
DAC230_T2_CH1_P: J55.C26 U54.3
DAC230_T2_CH2_N: J55.F24 U58.4(Q2)
DAC230_T2_CH2_P: J55.G24 U58.3
DAC230_T2_CH3_N: J55.B21 U60.4(Q2)
DAC230_T2_CH3_P: J55.C21 U60.3
DAC231_T3_CH0_N: J55.F19 U64.4(Q2)
DAC231_T3_CH0_P: J55.G19 U64.3
DAC231_T3_CH1_N: J55.B16 U62.4(Q2)
DAC231_T3_CH1_P: J55.C16 U62.3
DAC231_T3_CH2_N: J55.F14 U52.4(Q2)
DAC231_T3_CH2_P: J55.G14 U52.3
DAC231_T3_CH3_N: J55.B11 U56.4(Q2)
DAC231_T3_CH3_P: J55.C11 U56.3
DAC_AVTT_BUS: C42.1 C43.1 J48.12 J48.14 J55.F1
DACIO_00: J44.1 J55.A2
DACIO_01: J44.3 J55.A4
DACIO_02: J44.7 J55.B3
DACIO_03: J44.9(P9) J55.B5
DACIO_04: J44.13 J55.C2
DACIO_05: J44.15 J55.C4
DACIO_06: J44.19 J55.D3
DACIO_07: J44.21 J55.D5
DACIO_08: J48.1 J55.E2
DACIO_09: J48.3 J55.E4
DACIO_10: J44.4 J55.F3
DACIO_11: J44.6 J55.F5
DACIO_12: J44.10 J55.G2
DACIO_13: J44.12 J55.G4
DACIO_14: J44.16 J55.H3
DACIO_15: J44.18 J55.H5
DACIO_16: J44.22
DACIO_17: J44.24
DACIO_18: J48.4
DACIO_19: J48.6
RFMC_2_0_I2C_SCL: J49.B50
RFMC_2_0_I2C_SDA: J49.D50
RFMCP_I2C_SCL: J23.22
RFMCP_I2C_SDA: J23.24
TC_LAYER2_6INCH_N: J56.5 J56.8(P8)
TC_LAYER2_6INCH_P: J56.6 J56.7
TC_LAYER4_6INCH_N: J56.1 J56.4
TC_LAYER4_6INCH_P: J56.2 J56.3
UTIL_3V3: C29.1 C30.1 C31.1 J23.21 J23.23 J49.A45 J49.B44 J49.C45 J49.D44 J49.E45 J49.F44 J49.G45 J49.H44
UTIL_5V0: C39.1 C40.1 C41.1 J48.17 J48.19 J55.A8 J55.B9 J55.C8 J55.D9 J55.E8 J55.F9 J55.G8 J55.H9(9)
VADJ_ADC: C32.1 C33.1 J23.13 J23.15 J49.F50 J49.H50
VADJ_DAC: C34.1 C35.1 J48.9(P9) J48.11 J55.B1 J55.D1
VCM01_224: J49.A43
VCM01_225: J49.C43
VCM01_226: J49.E43
VCM01_227: J49.G43
VCM23_224: J49.B42
VCM23_225: J49.D42
VCM23_226: J49.F42
VCM23_227: J49.H42
N21561188: U1.3(OUT) U2.1
N22587809: U5.3(OUT) U6.1
N22588126: U9.3(OUT) U10.1
N22588563: U11.3(OUT) U12.1
N22589292: U13.3(OUT) U14.1
N22589426: U15.3(OUT) U16.1
N22589554: U3.3(OUT) U4.1
N22589688: U7.3(OUT) U8.1
N22600899: U17.3(OUT) U18.1
N22600909: U19.3(OUT) U20.1
N22601183: U21.3(OUT) U22.1
N22601193: U23.3(OUT) U24.1
N22601389: U25.3(OUT) U26.1
N22601525: U27.3(OUT) U28.1
N22601661: U29.3(OUT) U30.1
N22601797: U31.3(OUT) U32.1
N22605243: U33.1 U34.1
N22605253: U35.1 U36.1
N22605527: U37.1 U38.1
N22605537: U39.1 U40.1
N22607423: U45.1 U46.1
N22607425: U41.1 U42.1
N22607427: U43.1 U44.1
N22607429: U47.1 U48.1
N22610280: U49.1 U50.1
N22610290: U51.1 U52.1
N22610536: U53.1 U54.1
N22610546: U55.1 U56.1
N22610732: U57.1 U58.1
N22610862: U59.1 U60.1
N22610992: U61.1 U62.1
N22611194: U63.1 U64.1

Pads without a net: J23 5 7 8 9 10 11 12; J50 1; J51 1; J52 1; J53 1; J55 H1; MH1 1; MH2 1; MH3 1; MH4 1; U2 6; U4 6; U6 6; U8 6; U10 6; U12 6; U14 6; U16 6; U18 6; U20 6; U22 6; U24 6; U26 6; U28 6; U30 6; U32 6; U34 6; U36 6; U38 6; U40 6; U42 6; U44 6; U46 6; U48 6; U50 6; U52 6; U54 6; U56 6; U58 6; U60 6; U62 6; U64 6

## Via types
v1: diameter 0.381, hole 0.152, TOP to L02_RF_SIG, 74 vias
v2: diameter 0.381, hole 0.178, TOP to BOTTOM, 419 vias
v3: diameter 0.457, hole 0.203, TOP to BOTTOM, 759 vias
v4: diameter 0.406, hole 0.203, TOP to BOTTOM, 5826 vias
v5: diameter 0.508, hole 0.254, TOP to BOTTOM, 1236 vias
v6: diameter 0.457, hole 0.249, TOP to BOTTOM, 56 vias

## Routing (per net, layer and track width the routed paths; a pad name or vN(x,y) marks a point on that pad's centre or on a via; arc(x,y) is an arc through that point)
GND: length 99.2
  TOP w0.127: v2(29.44,220.44) v2(27.44,220.44) ; v2(29.44,33.44) v2(27.44,33.44) ; v2(41.44,178.44) v2(39.44,178.44) ; v2(41.44,202.44) v2(39.44,202.44) ; v2(29.44,81.44) v2(27.44,81.44) ; v2(29.44,160.44) v2(27.44,160.44) ; v2(29.44,148.44) v2(27.44,148.44) ; v2(41.44,51.44) v2(39.44,51.44) ; v2(29.44,196.44) v2(27.44,196.44) ; v2(41.44,154.44) v2(39.44,154.44) ; v2(41.44,111.44) v2(39.44,111.44) ; v2(41.44,214.44) v2(39.44,214.44) ; v2(29.44,172.44) v2(27.44,172.44) ; v2(29.44,21.44) v2(27.44,21.44) ; v2(41.44,99.44) v2(39.44,99.44) ; v2(29.44,105.44) v2(27.44,105.44) ; v2(41.44,142.44) v2(39.44,142.44) ; v2(41.44,63.44) v2(39.44,63.44) ; v2(41.44,75.44) v2(39.44,75.44) ; v2(41.44,27.44) v2(39.44,27.44) ; v2(29.44,136.44) v2(27.44,136.44) ; v2(29.44,45.44) v2(27.44,45.44) ; v2(29.44,69.44) v2(27.44,69.44) ; v2(41.44,166.44) v2(39.44,166.44) ; v2(41.44,39.44) v2(39.44,39.44) ; v2(29.35,208.44) v2(27.54,208.44) ; v2(29.44,57.44) v2(27.44,57.44) ; v2(41.44,226.44) v2(39.44,226.44) ; v2(29.44,93.44) v2(27.44,93.44) ; v2(29.44,184.44) v2(27.44,184.44) ; v2(41.44,87.44) v2(39.44,87.44) ; v2(41.44,190.44) v2(39.44,190.44)
  TOP w0.203: C37.2 v4(46.99,17.67) ; C36.2 v2(53.34,20.14) ; C42.2 v4(40,18.87) ; C27.2 v4(44.45,17.67) ; C39.2 v4(59.51,10.79) ; C40.2 v4(58.94,12.7) ; C34.2 v4(20.32,12.52) ; C38.2 v4(43.18,17.67) ; C32.2 v4(20.32,242.75) ; C35.2 v4(18.41,11.95) ; C43.2 v4(38.1,17.67) ; C31.2 v4(44.56,232.41) ; C33.2 v4(18.41,243.32) ; C30.2 v4(44.56,233.68) ; C25.2 v2(49.53,20.14) ; C29.2 v4(51.26,233.68) ; C41.2 v4(58.94,13.97)
  TOP w0.28: C26.2 v4(45.72,17.67)
  TOP w0.318: v2(28.64,183.47) 28.44,183.67 U8.5 ; U30.5 40.44,153.67 v2(40.64,153.47) ; v2(28.64,80.47) 28.44,80.67 U48.5 ; U36.5 40.44,74.67 v2(40.64,74.47) ; v2(40.64,141.47) 40.44,141.67 U20.5 ; v2(40.64,189.47) 40.44,189.67 U4.5 ; U46.5 40.44,86.67 v2(40.64,86.47) ; U16.5 28.44,195.67 v2(28.64,195.47) ; v2(28.64,171.47) 28.44,171.67 U22.5 ; v2(28.64,20.47) 28.44,20.67 U56.5 ; v2(40.64,50.47) 40.44,50.67 U58.5 ; U24.5 28.44,135.67 v2(28.64,135.47) ; U44.5 28.44,92.67 v2(28.64,92.47) ; U26.5 40.44,165.67 v2(40.64,165.47) ; U38.5 28.44,104.67 v2(28.64,104.47) ; v2(40.64,62.47) 40.44,62.67 U50.5 ; U10.5 40.44,213.67 v2(40.64,213.47) ; U40.5 28.44,68.67 v2(28.64,68.47) ; U64.5 40.44,38.67 v2(40.64,38.47) ; U18.5 40.44,177.67 v2(40.64,177.47) ; v2(28.64,44.47) 28.44,44.67 U60.5 ; U14.5 40.44,201.67 v2(40.64,201.47) ; U62.5 28.44,32.67 v2(28.64,32.47) ; v2(28.64,159.47) 28.44,159.67 U28.5 ; v2(40.64,98.47) 40.44,98.67 U42.5 ; U6.5 28.44,219.67 v2(28.64,219.47) ; v2(28.64,207.47) 28.44,207.67 U12.5 ; v2(28.64,147.47) 28.44,147.67 U32.5 ; U34.5 40.44,110.67 v2(40.64,110.47) ; v2(40.64,26.47) 40.44,26.67 U52.5 ; v2(28.64,56.47) 28.44,56.67 U54.5 ; v2(40.64,225.47) 40.44,225.67 U2.5
  vias: v2(27.44,221.69) v2(27.44,219.19) v2(27.44,209.69) v2(27.44,207.19) v2(27.44,197.69) v2(27.44,195.19) v2(27.44,185.69) v2(27.44,183.19) v2(27.44,173.69) v2(27.44,171.19) v2(27.44,161.69) v2(27.44,159.19) v2(27.44,149.69) v2(27.44,147.19) v2(27.44,137.69) v2(27.44,135.19) v2(27.44,106.69) v2(27.44,104.19) v2(27.44,94.69) v2(27.44,92.19) v2(27.44,82.69) v2(27.44,80.19) v2(27.44,70.69) v2(27.44,68.19) v2(27.44,58.69) v2(27.44,56.19) v2(27.44,46.69) v2(27.44,44.19) v2(27.44,34.69) v2(27.44,32.2) v2(27.44,22.7) v2(27.44,20.2) v2(28.44,221.5) v2(28.44,220.17) v2(28.44,209.5) v2(28.44,208.17) v2(28.44,197.5) v2(28.44,196.17) v2(28.44,185.5) v2(28.44,184.17) v2(28.44,173.5) v2(28.44,172.17) v2(28.44,161.5) v2(28.44,160.17) v2(28.44,149.5) v2(28.44,148.17) v2(28.44,137.5) v2(28.44,136.17) v2(28.44,106.5) v2(28.44,105.17) v2(28.44,94.5) v2(28.44,93.17) v2(28.44,82.5) v2(28.44,81.17) v2(28.44,70.5) v2(28.44,69.17) v2(28.44,58.5) v2(28.44,57.17) v2(28.44,46.5) v2(28.44,45.17) v2(28.44,34.5) v2(28.44,33.17) v2(28.44,22.5) v2(28.44,21.17) v2(29.44,221.69) v2(29.44,209.69) v2(29.44,197.69) v2(29.44,185.69) v2(29.44,173.69) v2(29.44,161.69) v2(29.44,149.69) v2(29.44,137.69) v2(29.44,106.69) v2(29.44,94.69) v2(29.44,82.69) v2(29.44,70.69) v2(29.44,58.69) v2(29.44,46.69) v2(29.44,34.69) v2(29.44,22.7) v2(30.75,222.04) v2(30.75,220.04) v2(30.75,210.04) v2(30.75,208.04) v2(30.75,198.04) v2(30.75,196.04) v2(30.75,186.04) v2(30.75,184.04) v2(30.75,174.04) v2(30.75,172.04) v2(30.75,162.04) v2(30.75,160.04) v2(30.75,150.04) v2(30.75,148.04) v2(30.75,138.04) v2(30.75,136.04) v2(30.75,107.04) v2(30.75,105.04) v2(30.75,95.04) v2(30.75,93.04) v2(30.75,83.04) v2(30.75,81.04) v2(30.75,71.04) v2(30.75,69.04) v2(30.75,59.04) v2(30.75,57.04) v2(30.75,47.04) v2(30.75,45.04) v2(30.75,35.04) v2(30.75,33.04) v2(30.75,23.04) v2(30.75,21.04) v2(31.25,221.04) v2(31.25,209.04) v2(31.25,197.04) v2(31.25,185.04) v2(31.25,173.04) v2(31.25,161.04) v2(31.25,149.04) v2(31.25,137.04) v2(31.25,106.04) v2(31.25,94.04) v2(31.25,82.04) v2(31.25,70.04) v2(31.25,58.04) v2(31.25,46.04) v2(31.25,34.04) v2(31.25,22.04) v2(31.75,222.04) v2(31.75,220.04) v2(31.75,210.04) v2(31.75,208.04) v2(31.75,198.04) v2(31.75,196.04) v2(31.75,186.04) v2(31.75,184.04) v2(31.75,174.04) v2(31.75,172.04) v2(31.75,162.04) v2(31.75,160.04) v2(31.75,150.04) v2(31.75,148.04) v2(31.75,138.04) v2(31.75,136.04) v2(31.75,107.04) v2(31.75,105.04) v2(31.75,95.04) v2(31.75,93.04) v2(31.75,83.04) v2(31.75,81.04) v2(31.75,71.04) v2(31.75,69.04) v2(31.75,59.04) v2(31.75,57.04) v2(31.75,47.04) v2(31.75,45.04) v2(31.75,35.04) v2(31.75,33.04) v2(31.75,23.04) v2(31.75,21.04) v2(39.44,227.69) v2(39.44,225.18) v2(39.44,213.19) v2(39.44,203.69) v2(39.44,201.19) v2(39.44,191.69) v2(39.44,189.19) v2(39.44,179.69) v2(39.44,177.19) v2(39.44,167.69) v2(39.44,165.19) v2(39.44,155.69) v2(39.44,153.19) v2(39.44,143.69) v2(39.44,141.19) v2(39.44,112.69) v2(39.44,110.19) v2(39.44,100.69) v2(39.44,98.19) v2(39.44,88.69) v2(39.44,86.19) v2(39.44,76.69) v2(39.44,74.19) v2(39.44,64.69) v2(39.44,62.19) v2(39.44,52.69) v2(39.44,50.19) v2(39.44,40.69) v2(39.44,38.19) v2(39.44,28.7) v2(39.44,26.2) v2(40.44,227.5) v2(40.44,226.17) v2(40.44,215.5) v2(40.44,214.17) v2(40.44,203.5) v2(40.44,202.17) v2(40.44,191.5) v2(40.44,190.17) v2(40.44,179.5) v2(40.44,178.17) v2(40.44,167.5) v2(40.44,166.17) v2(40.44,155.5) v2(40.44,154.17) v2(40.44,143.5) v2(40.44,142.17) v2(40.44,112.5) v2(40.44,111.17) v2(40.44,100.5) v2(40.44,99.17) v2(40.44,88.5) v2(40.44,87.17) v2(40.44,76.5) v2(40.44,75.17) v2(40.44,64.5) v2(40.44,63.17) v2(40.44,52.5) v2(40.44,51.17) v2(40.44,40.5) v2(40.44,39.17) v2(40.44,28.5) v2(40.44,27.17) v2(41.44,227.68) v2(41.44,215.69) v2(41.44,203.69) v2(41.44,191.69) v2(41.44,179.69) v2(41.44,167.69) v2(41.44,155.69) v2(41.44,143.69) v2(41.44,112.69) v2(41.44,100.69) v2(41.44,88.69) v2(41.44,76.69) v2(41.44,64.69) v2(41.44,52.69) v2(41.44,40.69) v2(41.44,28.7) v2(42.75,228.04) v2(42.75,226.04) v2(42.75,216.04) v2(42.75,214.04) v2(42.75,204.04) v2(42.75,202.04) v2(42.75,192.04) v2(42.75,190.04) v2(42.75,180.04) v2(42.75,178.04) v2(42.75,168.04) v2(42.75,166.04) v2(42.75,156.04) v2(42.75,154.04) v2(42.75,144.04) v2(42.75,142.04) v2(42.75,113.04) v2(42.75,111.04) v2(42.75,101.04) v2(42.75,99.04) v2(42.75,89.04) v2(42.75,87.04) v2(42.75,77.04) v2(42.75,75.04) v2(42.75,65.04) v2(42.75,63.04) v2(42.75,53.04) v2(42.75,51.04) v2(42.75,41.04) v2(42.75,39.04) v2(42.75,29.04) v2(42.75,27.04) v2(43.25,227.04) v2(43.25,215.04) v2(43.25,203.04) v2(43.25,191.04) v2(43.25,179.04) v2(43.25,167.04) v2(43.25,155.04) v2(43.25,143.04) v2(43.25,112.04) v2(43.25,100.04) v2(43.25,88.04) v2(43.25,76.04) v2(43.25,64.04) v2(43.25,52.04) v2(43.25,40.04) v2(43.25,28.04) v2(43.75,228.04) v2(43.75,226.04) v2(43.75,216.04) v2(43.75,214.04) v2(43.75,204.04) v2(43.75,202.04) v2(43.75,192.04) v2(43.75,190.04) v2(43.75,180.04) v2(43.75,178.04) v2(43.75,168.04) v2(43.75,166.04) v2(43.75,156.04) v2(43.75,154.04) v2(43.75,144.04) v2(43.75,142.04) v2(43.75,113.04) v2(43.75,111.04) v2(43.75,101.04) v2(43.75,99.04) v2(43.75,89.04) v2(43.75,87.04) v2(43.75,77.04) v2(43.75,75.04) v2(43.75,65.04) v2(43.75,63.04) v2(43.75,53.04) v2(43.75,51.04) v2(43.75,41.04) v2(43.75,39.04) v2(43.75,29.04) v2(43.75,27.04) v3(5.54,219.79) v3(5.54,217.25) v3(5.54,214.71) v3(5.54,212.17) v3(5.54,209.63) v3(5.54,208.36) v3(5.54,207.09) v3(5.54,205.82) v3(5.54,204.55) v3(5.54,203.28) v3(5.54,202.01) v3(5.54,200.74) v3(5.54,199.47) v3(5.54,198.2) v3(5.54,196.93) v3(5.54,195.66) v3(5.54,194.39) v3(5.54,193.12) v3(5.54,191.85) v3(5.54,190.58) v3(5.54,189.31) v3(5.54,188.04) v3(5.54,186.77) v3(5.54,185.5) v3(5.54,184.23) v3(5.54,182.96) v3(5.54,181.69) v3(5.54,180.42) v3(5.54,179.15) v3(5.54,177.88) v3(5.54,176.61) v3(5.54,175.34) v3(5.54,174.07) v3(5.54,172.8) v3(5.54,171.53) v3(5.54,170.26) v3(5.54,168.99) v3(5.54,167.72) v3(5.54,166.45) v3(5.54,165.18) v3(5.54,163.91) v3(5.54,162.64) v3(5.54,161.37) v3(5.54,160.1) v3(5.54,158.83) v3(5.54,157.56) v3(5.54,92.79) v3(5.54,91.52) v3(5.54,90.25) v3(5.54,88.98) v3(5.54,87.71) v3(5.54,86.44) v3(5.54,85.17) v3(5.54,83.9) v3(5.54,82.63) v3(5.54,81.36) v3(5.54,80.09) v3(5.54,78.82) v3(5.54,77.55) v3(5.54,76.28) v3(5.54,75.01) v3(5.54,73.74) v3(5.54,72.47) v3(5.54,71.2) v3(5.54,69.93) v3(5.54,68.66) v3(5.54,67.39) v3(5.54,66.12) v3(5.54,64.85) v3(5.54,63.58) v3(5.54,62.31) v3(5.54,61.04) v3(5.54,59.77) v3(5.54,58.5) v3(5.54,57.23) v3(5.54,55.96) v3(5.54,54.69) v3(5.54,53.42) v3(5.54,52.15) v3(5.54,50.88) v3(5.54,49.61) v3(5.54,48.34) v3(5.54,47.07) v3(5.54,45.8) v3(5.54,44.53) v3(5.54,43.26) v3(5.54,41.99) v3(5.54,40.72) v3(5.54,38.18) v3(5.54,35.64) v3(5.54,33.1) v3(5.54,30.56) v3(6.81,218.52) v3(6.81,215.98) v3(6.81,213.44) v3(6.81,210.9) v3(6.81,208.36) v3(6.81,207.09) v3(6.81,205.82) v3(6.81,204.55) v3(6.81,202.01) v3(6.81,200.74) v3(6.81,199.47) v3(6.81,198.2) v3(6.81,195.66) v3(6.81,194.39) v3(6.81,193.12) v3(6.81,191.85) v3(6.81,189.31) v3(6.81,188.04) v3(6.81,186.77) v3(6.81,185.5) v3(6.81,182.96) v3(6.81,181.69) v3(6.81,180.42) v3(6.81,179.15) v3(6.81,176.61) v3(6.81,175.34) v3(6.81,174.07) v3(6.81,172.8) v3(6.81,170.26) v3(6.81,168.99) v3(6.81,167.72) v3(6.81,166.45) v3(6.81,163.91) v3(6.81,162.64) v3(6.81,161.37) v3(6.81,160.1) v3(6.81,157.56) v3(6.81,92.79) v3(6.81,91.52) v3(6.81,90.25) v3(6.81,88.98) v3(6.81,86.44) v3(6.81,85.17) v3(6.81,83.9) v3(6.81,82.63) v3(6.81,80.09) v3(6.81,78.82) v3(6.81,77.55) v3(6.81,76.28) v3(6.81,73.74) v3(6.81,72.47) v3(6.81,71.2) v3(6.81,69.93) v3(6.81,67.39) v3(6.81,66.12) v3(6.81,64.85) v3(6.81,63.58) v3(6.81,61.04) v3(6.81,59.77) v3(6.81,58.5) v3(6.81,57.23) v3(6.81,54.69) v3(6.81,53.42) v3(6.81,52.15) v3(6.81,50.88) v3(6.81,48.34) v3(6.81,47.07) v3(6.81,45.8) v3(6.81,44.53) v3(6.81,41.99) v3(6.81,39.45) v3(6.81,36.91) v3(6.81,34.37) v3(6.81,31.83) v3(8.08,219.79) v3(8.08,217.25) v3(8.08,214.71) v3(8.08,212.17) v3(8.08,209.63) v3(8.08,208.36) v3(8.08,207.09) v3(8.08,205.82) v3(8.08,204.55) v3(8.08,202.01) v3(8.08,200.74) v3(8.08,199.47) v3(8.08,198.2) v3(8.08,195.66) v3(8.08,194.39) v3(8.08,193.12) v3(8.08,191.85) v3(8.08,189.31) v3(8.08,188.04) v3(8.08,186.77) v3(8.08,185.5) v3(8.08,182.96) v3(8.08,181.69) v3(8.08,180.42) v3(8.08,179.15) v3(8.08,176.61) v3(8.08,175.34) v3(8.08,174.07) v3(8.08,172.8) v3(8.08,170.26) v3(8.08,168.99) v3(8.08,167.72) v3(8.08,166.45) v3(8.08,163.91) v3(8.08,162.64) v3(8.08,161.37) v3(8.08,160.1) v3(8.08,157.56) v3(8.08,92.79) v3(8.08,91.52) v3(8.08,90.25) v3(8.08,88.98) v3(8.08,86.44) v3(8.08,85.17) v3(8.08,83.9) v3(8.08,82.63) v3(8.08,80.09) v3(8.08,78.82) v3(8.08,77.55) v3(8.08,76.28) v3(8.08,73.74) v3(8.08,72.47) v3(8.08,71.2) v3(8.08,69.93) v3(8.08,67.39) v3(8.08,66.12) v3(8.08,64.85) v3(8.08,63.58) v3(8.08,61.04) v3(8.08,59.77) v3(8.08,58.5) v3(8.08,57.23) v3(8.08,54.69) v3(8.08,53.42) v3(8.08,52.15) v3(8.08,50.88) v3(8.08,48.34) v3(8.08,47.07) v3(8.08,45.8) v3(8.08,44.53) v3(8.08,41.99) v3(8.08,40.72) v3(8.08,38.18) v3(8.08,35.64) v3(8.08,33.1) v3(8.08,30.56) v3(9.35,218.52) v3(9.35,215.98) v3(9.35,213.44) v3(9.35,210.9) v3(9.35,208.36) v3(9.35,207.09) v3(9.35,205.82) v3(9.35,204.55) v3(9.35,203.28) v3(9.35,202.01) v3(9.35,200.74) v3(9.35,199.47) v3(9.35,198.2) v3(9.35,196.93) v3(9.35,195.66) v3(9.35,194.39) v3(9.35,193.12) v3(9.35,191.85) v3(9.35,190.58) v3(9.35,189.31) v3(9.35,188.04) v3(9.35,186.77) v3(9.35,185.5) v3(9.35,184.23) v3(9.35,182.96) v3(9.35,181.69) v3(9.35,180.42) v3(9.35,179.15) v3(9.35,177.88) v3(9.35,176.61) v3(9.35,175.34) v3(9.35,174.07) v3(9.35,172.8) v3(9.35,171.53) v3(9.35,170.26) v3(9.35,168.99) v3(9.35,167.72) v3(9.35,166.45) v3(9.35,165.18) v3(9.35,163.91) v3(9.35,162.64) v3(9.35,161.37) v3(9.35,160.1) v3(9.35,158.83) v3(9.35,157.56) v3(9.35,92.79) v3(9.35,91.52) v3(9.35,90.25) v3(9.35,88.98) v3(9.35,87.71) v3(9.35,86.44) v3(9.35,85.17) v3(9.35,83.9) v3(9.35,82.63) v3(9.35,81.36) v3(9.35,80.09) v3(9.35,78.82) v3(9.35,77.55) v3(9.35,76.28) v3(9.35,75.01) v3(9.35,73.74) v3(9.35,72.47) v3(9.35,71.2) v3(9.35,69.93) v3(9.35,68.66) v3(9.35,67.39) v3(9.35,66.12) v3(9.35,64.85) v3(9.35,63.58) v3(9.35,62.31) v3(9.35,61.04) v3(9.35,59.77) v3(9.35,58.5) v3(9.35,57.23) v3(9.35,55.96) v3(9.35,54.69) v3(9.35,53.42) v3(9.35,52.15) v3(9.35,50.88) v3(9.35,49.61) v3(9.35,48.34) v3(9.35,47.07) v3(9.35,45.8) v3(9.35,44.53) v3(9.35,43.26) v3(9.35,41.99) v3(9.35,39.45) v3(9.35,36.91) v3(9.35,34.37) v3(9.35,31.83) v3(10.62,219.79) v3(10.62,217.25) v3(10.62,214.71) v3(10.62,212.17) v3(10.62,209.63) v3(10.62,208.36) v3(10.62,207.09) v3(10.62,205.82) v3(10.62,204.55) v3(10.62,203.28) v3(10.62,202.01) v3(10.62,200.74) v3(10.62,199.47) v3(10.62,198.2) v3(10.62,196.93) v3(10.62,195.66) v3(10.62,194.39) v3(10.62,193.12) v3(10.62,191.85) v3(10.62,190.58) v3(10.62,189.31) v3(10.62,188.04) v3(10.62,186.77) v3(10.62,185.5) v3(10.62,184.23) v3(10.62,182.96) v3(10.62,181.69) v3(10.62,180.42) v3(10.62,179.15) v3(10.62,177.88) v3(10.62,176.61) v3(10.62,175.34) v3(10.62,174.07) v3(10.62,172.8) v3(10.62,171.53) v3(10.62,170.26) v3(10.62,168.99) v3(10.62,167.72) v3(10.62,166.45) v3(10.62,165.18) v3(10.62,163.91) v3(10.62,162.64) v3(10.62,161.37) v3(10.62,160.1) v3(10.62,158.83) v3(10.62,157.56) v3(10.62,92.79) v3(10.62,91.52) v3(10.62,90.25) v3(10.62,88.98) v3(10.62,87.71) v3(10.62,86.44) v3(10.62,85.17) v3(10.62,83.9) v3(10.62,82.63) v3(10.62,81.36) v3(10.62,80.09) v3(10.62,78.82) v3(10.62,77.55) v3(10.62,76.28) v3(10.62,75.01) v3(10.62,73.74) v3(10.62,72.47) v3(10.62,71.2) v3(10.62,69.93) v3(10.62,68.66) v3(10.62,67.39) v3(10.62,66.12) v3(10.62,64.85) v3(10.62,63.58) v3(10.62,62.31) v3(10.62,61.04) v3(10.62,59.77) v3(10.62,58.5) v3(10.62,57.23) v3(10.62,55.96) v3(10.62,54.69) v3(10.62,53.42) v3(10.62,52.15) v3(10.62,50.88) v3(10.62,49.61) v3(10.62,48.34) v3(10.62,47.07) v3(10.62,45.8) v3(10.62,44.53) v3(10.62,43.26) v3(10.62,41.99) v3(10.62,40.72) v3(10.62,38.18) v3(10.62,35.64) v3(10.62,33.1) v3(10.62,30.56) v3(11.89,218.52) v3(11.89,215.98) v3(11.89,213.44) v3(11.89,210.9) v3(11.89,208.36) v3(11.89,205.82) v3(11.89,204.55) v3(11.89,203.28) v3(11.89,202.01) v3(11.89,199.47) v3(11.89,198.2) v3(11.89,196.93) v3(11.89,195.66) v3(11.89,193.12) v3(11.89,191.85) v3(11.89,190.58) v3(11.89,189.31) v3(11.89,186.77) v3(11.89,185.5) v3(11.89,184.23) v3(11.89,182.96) v3(11.89,180.42) v3(11.89,179.15) v3(11.89,177.88) v3(11.89,176.61) v3(11.89,174.07) v3(11.89,172.8) v3(11.89,171.53) v3(11.89,170.26) v3(11.89,167.72) v3(11.89,166.45) v3(11.89,165.18) v3(11.89,163.91) v3(11.89,161.37) v3(11.89,160.1) v3(11.89,158.83) v3(11.89,157.56) v3(11.89,92.79) v3(11.89,90.25) v3(11.89,88.98) v3(11.89,87.71) v3(11.89,86.44) v3(11.89,83.9) v3(11.89,82.63) v3(11.89,81.36) v3(11.89,80.09) v3(11.89,77.55) v3(11.89,76.28) v3(11.89,75.01) v3(11.89,73.74) v3(11.89,71.2) v3(11.89,69.93) v3(11.89,68.66) v3(11.89,67.39) v3(11.89,64.85) v3(11.89,63.58) v3(11.89,62.31) v3(11.89,61.04) v3(11.89,58.5) v3(11.89,57.23) v3(11.89,55.96) v3(11.89,54.69) v3(11.89,52.15) v3(11.89,50.88) v3(11.89,49.61) v3(11.89,48.34) v3(11.89,45.8) v3(11.89,44.53) v3(11.89,43.26) v3(11.89,41.99) v3(11.89,39.45) v3(11.89,36.91) v3(11.89,34.37) v3(11.89,31.83) v3(13.16,219.79) v3(13.16,217.25) v3(13.16,214.71) v3(13.16,212.17) v3(13.16,209.63) v3(13.16,208.36) v3(13.16,205.82) v3(13.16,204.55) v3(13.16,203.28) v3(13.16,202.01) v3(13.16,199.47) v3(13.16,198.2) v3(13.16,196.93) v3(13.16,195.66) v3(13.16,193.12) v3(13.16,191.85) v3(13.16,190.58) v3(13.16,189.31) v3(13.16,186.77) v3(13.16,185.5) v3(13.16,184.23) v3(13.16,182.96) v3(13.16,180.42) v3(13.16,179.15) v3(13.16,177.88) v3(13.16,176.61) v3(13.16,174.07) v3(13.16,172.8) v3(13.16,171.53) v3(13.16,170.26) v3(13.16,167.72) v3(13.16,166.45) v3(13.16,165.18) v3(13.16,163.91) v3(13.16,161.37) v3(13.16,160.1) v3(13.16,158.83) v3(13.16,157.56) v3(13.16,92.79) v3(13.16,90.25) v3(13.16,88.98) v3(13.16,87.71) v3(13.16,86.44) v3(13.16,83.9) v3(13.16,82.63) v3(13.16,81.36) v3(13.16,80.09) v3(13.16,77.55) v3(13.16,76.28) v3(13.16,75.01) v3(13.16,73.74) v3(13.16,71.2) v3(13.16,69.93) v3(13.16,68.66) v3(13.16,67.39) v3(13.16,64.85) v3(13.16,63.58) v3(13.16,62.31) v3(13.16,61.04) v3(13.16,58.5) v3(13.16,57.23) v3(13.16,55.96) v3(13.16,54.69) v3(13.16,52.15) v3(13.16,50.88) v3(13.16,49.61) v3(13.16,48.34) v3(13.16,45.8) v3(13.16,44.53) v3(13.16,43.26) v3(13.16,41.99) v3(13.16,40.72) v3(13.16,38.18) v3(13.16,35.64) v3(13.16,33.1) v3(13.16,30.56) v3(14.43,218.52) v3(14.43,215.98) v3(14.43,213.44) v3(14.43,210.9) v3(14.43,208.36) v3(14.43,207.09) v3(14.43,205.82) v3(14.43,204.55) v3(14.43,203.28) v3(14.43,202.01) v3(14.43,200.74) v3(14.43,199.47) v3(14.43,198.2) v3(14.43,196.93) v3(14.43,195.66) v3(14.43,194.39) v3(14.43,193.12) v3(14.43,191.85) v3(14.43,190.58) v3(14.43,189.31) v3(14.43,188.04) v3(14.43,186.77) v3(14.43,185.5) v3(14.43,184.23) v3(14.43,182.96) v3(14.43,181.69) v3(14.43,180.42) v3(14.43,179.15) v3(14.43,177.88) v3(14.43,176.61) v3(14.43,175.34) v3(14.43,174.07) v3(14.43,172.8) v3(14.43,171.53) v3(14.43,170.26) v3(14.43,168.99) v3(14.43,167.72) v3(14.43,166.45) v3(14.43,165.18) v3(14.43,163.91) v3(14.43,162.64) v3(14.43,161.37) v3(14.43,160.1) v3(14.43,158.83) v3(14.43,157.56) v3(14.43,92.79) v3(14.43,91.52) v3(14.43,90.25) v3(14.43,88.98) v3(14.43,87.71) v3(14.43,86.44) v3(14.43,85.17) v3(14.43,83.9) v3(14.43,82.63) v3(14.43,81.36) v3(14.43,80.09) v3(14.43,78.82) v3(14.43,77.55) v3(14.43,76.28) v3(14.43,75.01) v3(14.43,73.74) v3(14.43,72.47) v3(14.43,71.2) v3(14.43,69.93) v3(14.43,68.66) v3(14.43,67.39) v3(14.43,66.12) v3(14.43,64.85) v3(14.43,63.58) v3(14.43,62.31) v3(14.43,61.04) v3(14.43,59.77) v3(14.43,58.5) v3(14.43,57.23) v3(14.43,55.96) v3(14.43,54.69) v3(14.43,53.42) v3(14.43,52.15) v3(14.43,50.88) v3(14.43,49.61) v3(14.43,48.34) v3(14.43,47.07) v3(14.43,45.8) v3(14.43,44.53) v3(14.43,43.26) v3(14.43,41.99) v3(14.43,39.45) v3(14.43,36.91) v3(14.43,34.37) v3(14.43,31.83) v4(5.54,208.99) v4(5.54,207.72) v4(5.54,206.45) v4(5.54,205.18) v4(5.54,203.91) v4(5.54,202.64) v4(5.54,201.37) v4(5.54,200.1) v4(5.54,198.83) v4(5.54,197.56) v4(5.54,196.29) v4(5.54,195.02) v4(5.54,193.75) v4(5.54,192.48) v4(5.54,191.21) v4(5.54,189.94) v4(5.54,188.67) v4(5.54,187.4) v4(5.54,186.13) v4(5.54,184.86) v4(5.54,183.59) v4(5.54,182.32) v4(5.54,181.05) v4(5.54,179.78) v4(5.54,178.51) v4(5.54,177.24) v4(5.54,175.97) v4(5.54,174.7) v4(5.54,173.43) v4(5.54,172.16) v4(5.54,170.89) v4(5.54,169.62) v4(5.54,168.35) v4(5.54,167.08) v4(5.54,165.81) v4(5.54,164.54) v4(5.54,163.27) v4(5.54,162) v4(5.54,160.73) v4(5.54,159.46) v4(5.54,158.19) v4(5.54,92.15) v4(5.54,90.88) v4(5.54,89.61) v4(5.54,88.34) v4(5.54,87.07) v4(5.54,85.8) v4(5.54,84.53) v4(5.54,83.26) v4(5.54,81.99) v4(5.54,80.72) v4(5.54,79.45) v4(5.54,78.18) v4(5.54,76.91) v4(5.54,75.64) v4(5.54,74.37) v4(5.54,73.1) v4(5.54,71.83) v4(5.54,70.56) v4(5.54,69.29) v4(5.54,68.02) v4(5.54,66.75) v4(5.54,65.48) v4(5.54,64.21) v4(5.54,62.94) v4(5.54,61.67) v4(5.54,60.4) v4(5.54,59.13) v4(5.54,57.86) v4(5.54,56.59) v4(5.54,55.32) v4(5.54,54.05) v4(5.54,52.78) v4(5.54,51.51) v4(5.54,50.24) v4(5.54,48.97) v4(5.54,47.7) v4(5.54,46.43) v4(5.54,45.16) v4(5.54,43.89) v4(5.54,42.62) v4(5.69,135.46) v4(5.69,133.46) v4(5.7,131.54) v4(5.69,129.46) v4(5.69,127.46) v4(5.69,124.63) v4(5.69,122.63) v4(5.69,120.72) v4(5.69,118.86) v4(5.69,116.95) v4(6.04,114.66) v4(6.17,208.99) v4(6.17,208.36) v4(6.17,207.72) v4(6.17,207.09) v4(6.17,206.45) v4(6.17,205.82) v4(6.17,205.18) v4(6.17,204.55) v4(6.17,203.91) v4(6.17,202.64) v4(6.17,202.01) v4(6.17,201.37) v4(6.17,200.74) v4(6.17,200.1) v4(6.17,199.47) v4(6.17,198.83) v4(6.17,198.2) v4(6.17,197.56) v4(6.17,196.29) v4(6.17,195.66) v4(6.17,195.02) v4(6.17,194.39) v4(6.17,193.75) v4(6.17,193.12) v4(6.17,192.48) v4(6.17,191.85) v4(6.17,191.21) v4(6.17,189.94) v4(6.17,189.31) v4(6.17,188.67) v4(6.17,188.04) v4(6.17,187.4) v4(6.17,186.77) v4(6.17,186.13) v4(6.17,185.5) v4(6.17,184.86) v4(6.17,183.59) v4(6.17,182.96) v4(6.17,182.32) v4(6.17,181.69) v4(6.17,181.05) v4(6.17,180.42) v4(6.17,179.78) v4(6.17,179.15) v4(6.17,178.51) v4(6.17,177.24) v4(6.17,176.61) v4(6.17,175.97) v4(6.17,175.34) v4(6.17,174.7) v4(6.17,174.07) v4(6.17,173.43) v4(6.17,172.8) v4(6.17,172.16) v4(6.17,170.89) v4(6.17,170.26) v4(6.17,169.62) v4(6.17,168.99) v4(6.17,168.35) v4(6.17,167.72) v4(6.17,167.08) v4(6.17,166.45) v4(6.17,165.81) v4(6.17,164.54) v4(6.17,163.91) v4(6.17,163.27) v4(6.17,162.64) v4(6.17,162) v4(6.17,161.37) v4(6.17,160.73) v4(6.17,160.1) v4(6.17,159.46) v4(6.17,158.19) v4(6.17,157.56) v4(6.17,92.79) v4(6.17,92.15) v4(6.17,91.52) v4(6.17,90.88) v4(6.17,90.25) v4(6.17,89.61) v4(6.17,88.98) v4(6.17,88.34) v4(6.17,87.07) v4(6.17,86.44) v4(6.17,85.8) v4(6.17,85.17) v4(6.17,84.53) v4(6.17,83.9) v4(6.17,83.26) v4(6.17,82.63) v4(6.17,81.99) v4(6.17,80.72) v4(6.17,80.09) v4(6.17,79.45) v4(6.17,78.82) v4(6.17,78.18) v4(6.17,77.55) v4(6.17,76.91) v4(6.17,76.28) v4(6.17,75.64) v4(6.17,74.37) v4(6.17,73.74) v4(6.17,73.1) v4(6.17,72.47) v4(6.17,71.83) v4(6.17,71.2) v4(6.17,70.56) v4(6.17,69.93) v4(6.17,69.29) v4(6.17,68.02) v4(6.17,67.39) v4(6.17,66.75) v4(6.17,66.12) v4(6.17,65.48) v4(6.17,64.85) v4(6.17,64.21) v4(6.17,63.58) v4(6.17,62.94) v4(6.17,61.67) v4(6.17,61.04) v4(6.17,60.4) v4(6.17,59.77) v4(6.17,59.13) v4(6.17,58.5) v4(6.17,57.86) v4(6.17,57.23) v4(6.17,56.59) v4(6.17,55.32) v4(6.17,54.69) v4(6.17,54.05) v4(6.17,53.42) v4(6.17,52.78) v4(6.17,52.15) v4(6.17,51.51) v4(6.17,50.88) v4(6.17,50.24) v4(6.17,48.97) v4(6.17,48.34) v4(6.17,47.7) v4(6.17,47.07) v4(6.17,46.43) v4(6.17,45.8) v4(6.17,45.16) v4(6.17,44.53) v4(6.17,43.89) v4(6.17,42.62) v4(6.17,41.99) v4(6.81,207.72) v4(6.81,206.45) v4(6.81,205.18) v4(6.81,201.37) v4(6.81,200.1) v4(6.81,198.83) v4(6.81,195.02) v4(6.81,193.75) v4(6.81,192.48) v4(6.81,188.67) v4(6.81,187.4) v4(6.81,186.13) v4(6.81,182.32) v4(6.81,181.05) v4(6.81,179.78) v4(6.81,175.97) v4(6.81,174.7) v4(6.81,173.43) v4(6.81,169.62) v4(6.81,168.35) v4(6.81,167.08) v4(6.81,163.27) v4(6.81,162) v4(6.81,160.73) v4(6.81,92.15) v4(6.81,90.88) v4(6.81,89.61) v4(6.81,85.8) v4(6.81,84.53) v4(6.81,83.26) v4(6.81,79.45) v4(6.81,78.18) v4(6.81,76.91) v4(6.81,73.1) v4(6.81,71.83) v4(6.81,70.56) v4(6.81,66.75) v4(6.81,65.48) v4(6.81,64.21) v4(6.81,60.4) v4(6.81,59.13) v4(6.81,57.86) v4(6.81,54.05) v4(6.81,52.78) v4(6.81,51.51) v4(6.81,47.7) v4(6.81,46.43) v4(6.81,45.16) v4(7.44,208.99) v4(7.44,208.36) v4(7.44,207.72) v4(7.44,207.09) v4(7.44,206.45) v4(7.44,205.82) v4(7.44,205.18) v4(7.44,204.55) v4(7.44,202.01) v4(7.44,201.37) v4(7.44,200.74) v4(7.44,200.1) v4(7.44,199.47) v4(7.44,198.83) v4(7.44,198.2) v4(7.44,195.66) v4(7.44,195.02) v4(7.44,194.39) v4(7.44,193.75) v4(7.44,193.12) v4(7.44,192.48) v4(7.44,191.85) v4(7.44,189.31) v4(7.44,188.67) v4(7.44,188.04) v4(7.44,187.4) v4(7.44,186.77) v4(7.44,186.13) v4(7.44,185.5) v4(7.44,182.96) v4(7.44,182.32) v4(7.44,181.69) v4(7.44,181.05) v4(7.44,180.42) v4(7.44,179.78) v4(7.44,179.15) v4(7.44,176.61) v4(7.44,175.97) v4(7.44,175.34) v4(7.44,174.7) v4(7.44,174.07) v4(7.44,173.43) v4(7.44,172.8) v4(7.44,170.26) v4(7.44,169.62) v4(7.44,168.99) v4(7.44,168.35) v4(7.44,167.72) v4(7.44,167.08) v4(7.44,166.45) v4(7.44,163.91) v4(7.44,163.27) v4(7.44,162.64) v4(7.44,162) v4(7.44,161.37) v4(7.44,160.73) v4(7.44,160.1) v4(7.44,157.56) v4(7.4,137.6) v4(7.44,92.79) v4(7.44,92.15) v4(7.44,91.52) v4(7.44,90.88) v4(7.44,90.25) v4(7.44,89.61) v4(7.44,88.98) v4(7.44,86.44) v4(7.44,85.8) v4(7.44,85.17) v4(7.44,84.53) v4(7.44,83.9) v4(7.44,83.26) v4(7.44,82.63) v4(7.44,80.09) v4(7.44,79.45) v4(7.44,78.82) v4(7.44,78.18) v4(7.44,77.55) v4(7.44,76.91) v4(7.44,76.28) v4(7.44,73.74) v4(7.44,73.1) v4(7.44,72.47) v4(7.44,71.83) v4(7.44,71.2) v4(7.44,70.56) v4(7.44,69.93) v4(7.44,67.39) v4(7.44,66.75) v4(7.44,66.12) v4(7.44,65.48) v4(7.44,64.85) v4(7.44,64.21) v4(7.44,63.58) v4(7.44,61.04) v4(7.44,60.4) v4(7.44,59.77) v4(7.44,59.13) v4(7.44,58.5) v4(7.44,57.86) v4(7.44,57.23) v4(7.44,54.69) v4(7.44,54.05) v4(7.44,53.42) v4(7.44,52.78) v4(7.44,52.15) v4(7.44,51.51) v4(7.44,50.88) v4(7.44,48.34) v4(7.44,47.7) v4(7.44,47.07) v4(7.44,46.43) v4(7.44,45.8) v4(7.44,45.16) v4(7.44,44.53) v4(7.44,41.99) v4(7.54,134.65) v4(7.54,132.65) v4(7.49,130.17) v4(7.54,122.65) v4(7.54,120.74) v4(7.54,118.88) v4(7.54,116.96) v4(7.72,127.65) v4(7.76,113.65) v4(8.08,208.99) v4(8.08,207.72) v4(8.08,206.45) v4(8.08,205.18) v4(8.08,201.37) v4(8.08,200.1) v4(8.08,198.83) v4(8.08,195.02) v4(8.08,193.75) v4(8.08,192.48) v4(8.08,188.67) v4(8.08,187.4) v4(8.08,186.13) v4(8.08,182.32) v4(8.08,181.05) v4(8.08,179.78) v4(8.08,175.97) v4(8.08,174.7) v4(8.08,173.43) v4(8.08,169.62) v4(8.08,168.35) v4(8.08,167.08) v4(8.08,163.27) v4(8.08,162) v4(8.08,160.73) v4(8.12,125.35) v4(8.08,92.15) v4(8.08,90.88) v4(8.08,89.61) v4(8.08,85.8) v4(8.08,84.53) v4(8.08,83.26) v4(8.08,79.45) v4(8.08,78.18) v4(8.08,76.91) v4(8.08,73.1) v4(8.08,71.83) v4(8.08,70.56) v4(8.08,66.75) v4(8.08,65.48) v4(8.08,64.21) v4(8.08,60.4) v4(8.08,59.13) v4(8.08,57.86) v4(8.08,54.05) v4(8.08,52.78) v4(8.08,51.51) v4(8.08,47.7) v4(8.08,46.43) v4(8.08,45.16) v4(8.33,115.62) v4(8.71,208.99) v4(8.71,208.36) v4(8.71,207.72) v4(8.71,207.09) v4(8.71,206.45) v4(8.71,205.82) v4(8.71,205.18) v4(8.71,204.55) v4(8.71,202.01) v4(8.71,201.37) v4(8.71,200.74) v4(8.71,200.1) v4(8.71,199.47) v4(8.71,198.83) v4(8.71,198.2) v4(8.71,195.66) v4(8.71,195.02) v4(8.71,194.39) v4(8.71,193.75) v4(8.71,193.12) v4(8.71,192.48) v4(8.71,191.85) v4(8.71,189.31) v4(8.71,188.67) v4(8.71,188.04) v4(8.71,187.4) v4(8.71,186.77) v4(8.71,186.13) v4(8.71,185.5) v4(8.71,182.96) v4(8.71,182.32) v4(8.71,181.69) v4(8.71,181.05) v4(8.71,180.42) v4(8.71,179.78) v4(8.71,179.15) v4(8.71,176.61) v4(8.71,175.97) v4(8.71,175.34) v4(8.71,174.7) v4(8.71,174.07) v4(8.71,173.43) v4(8.71,172.8) v4(8.71,170.26) v4(8.71,169.62) v4(8.71,168.99) v4(8.71,168.35) v4(8.71,167.72) v4(8.71,167.08) v4(8.71,166.45) v4(8.71,163.91) v4(8.71,163.27) v4(8.71,162.64) v4(8.71,162) v4(8.71,161.37) v4(8.71,160.73) v4(8.71,160.1) v4(8.71,157.56) v4(8.71,92.79) v4(8.71,92.15) v4(8.71,91.52) v4(8.71,90.88) v4(8.71,90.25) v4(8.71,89.61) v4(8.71,88.98) v4(8.71,86.44) v4(8.71,85.8) v4(8.71,85.17) v4(8.71,84.53) v4(8.71,83.9) v4(8.71,83.26) v4(8.71,82.63) v4(8.71,80.09) v4(8.71,79.45) v4(8.71,78.82) v4(8.71,78.18) v4(8.71,77.55) v4(8.71,76.91) v4(8.71,76.28) v4(8.71,73.74) v4(8.71,73.1) v4(8.71,72.47) v4(8.71,71.83) v4(8.71,71.2) v4(8.71,70.56) v4(8.71,69.93) v4(8.71,67.39) v4(8.71,66.75) v4(8.71,66.12) v4(8.71,65.48) v4(8.71,64.85) v4(8.71,64.21) v4(8.71,63.58) v4(8.71,61.04) v4(8.71,60.4) v4(8.71,59.77) v4(8.71,59.13) v4(8.71,58.5) v4(8.71,57.86) v4(8.71,57.23) v4(8.71,54.69) v4(8.71,54.05) v4(8.71,53.42) v4(8.71,52.78) v4(8.71,52.15) v4(8.71,51.51) v4(8.71,50.88) v4(8.71,48.34) v4(8.71,47.7) v4(8.71,47.07) v4(8.71,46.43) v4(8.71,45.8) v4(8.71,45.16) v4(8.71,44.53) v4(8.71,41.99) v4(8.92,123.64) v4(9.16,135.81) v4(9.35,207.72) v4(9.35,206.45) v4(9.35,205.18) v4(9.35,201.37) v4(9.35,200.1) v4(9.35,198.83) v4(9.35,195.02) v4(9.35,193.75) v4(9.35,192.48) v4(9.35,188.67) v4(9.35,187.4) v4(9.35,186.13) v4(9.35,182.32) v4(9.35,181.05) v4(9.35,179.78) v4(9.35,175.97) v4(9.35,174.7) v4(9.35,173.43) v4(9.35,169.62) v4(9.35,168.35) v4(9.35,167.08) v4(9.35,163.27) v4(9.35,162) v4(9.35,160.73) v4(9.35,92.15) v4(9.35,90.88) v4(9.35,89.61) v4(9.35,85.8) v4(9.35,84.53) v4(9.35,83.26) v4(9.35,79.45) v4(9.35,78.18) v4(9.35,76.91) v4(9.35,73.1) v4(9.35,71.83) v4(9.35,70.56) v4(9.35,66.75) v4(9.35,65.48) v4(9.35,64.21) v4(9.35,60.4) v4(9.35,59.13) v4(9.35,57.86) v4(9.35,54.05) v4(9.35,52.78) v4(9.35,51.51) v4(9.35,47.7) v4(9.35,46.43) v4(9.35,45.16) v4(9.4,137.66) v4(9.72,127.66) v4(9.76,113.64) v4(9.98,208.99) v4(9.98,208.36) v4(9.98,207.72) v4(9.98,207.09) v4(9.98,206.45) v4(9.98,205.82) v4(9.98,205.18) v4(9.98,204.55) v4(9.98,202.01) v4(9.98,201.37) v4(9.98,200.74) v4(9.98,200.1) v4(9.98,199.47) v4(9.98,198.83) v4(9.98,198.2) v4(9.98,195.66) v4(9.98,195.02) v4(9.98,194.39) v4(9.98,193.75) v4(9.98,193.12) v4(9.98,192.48) v4(9.98,191.85) v4(9.98,189.31) v4(9.98,188.67) v4(9.98,188.04) v4(9.98,187.4) v4(9.98,186.77) v4(9.98,186.13) v4(9.98,185.5) v4(9.98,182.96) v4(9.98,182.32) v4(9.98,181.69) v4(9.98,181.05) v4(9.98,180.42) v4(9.98,179.78) v4(9.98,179.15) v4(9.98,176.61) v4(9.98,175.97) v4(9.98,175.34) v4(9.98,174.7) v4(9.98,174.07) v4(9.98,173.43) v4(9.98,172.8) v4(9.98,170.26) v4(9.98,169.62) v4(9.98,168.99) v4(9.98,168.35) v4(9.98,167.72) v4(9.98,167.08) v4(9.98,166.45) v4(9.98,163.91) v4(9.98,163.27) v4(9.98,162.64) v4(9.98,162) v4(9.98,161.37) v4(9.98,160.73) v4(9.98,160.1) v4(9.98,157.56) v4(9.98,92.79) v4(9.98,92.15) v4(9.98,91.52) v4(9.98,90.88) v4(9.98,90.25) v4(9.98,89.61) v4(9.98,88.98) v4(9.98,86.44) v4(9.98,85.8) v4(9.98,85.17) v4(9.98,84.53) v4(9.98,83.9) v4(9.98,83.26) v4(9.98,82.63) v4(9.98,80.09) v4(9.98,79.45) v4(9.98,78.82) v4(9.98,78.18) v4(9.98,77.55) v4(9.98,76.91) v4(9.98,76.28) v4(9.98,73.74) v4(9.98,73.1) v4(9.98,72.47) v4(9.98,71.83) v4(9.98,71.2) v4(9.98,70.56) v4(9.98,69.93) v4(9.98,67.39) v4(9.98,66.75) v4(9.98,66.12) v4(9.98,65.48) v4(9.98,64.85) v4(9.98,64.21) v4(9.98,63.58) v4(9.98,61.04) v4(9.98,60.4) v4(9.98,59.77) v4(9.98,59.13) v4(9.98,58.5) v4(9.98,57.86) v4(9.98,57.23) v4(9.98,54.69) v4(9.98,54.05) v4(9.98,53.42) v4(9.98,52.78) v4(9.98,52.15) v4(9.98,51.51) v4(9.98,50.88) v4(9.98,48.34) v4(9.98,47.7) v4(9.98,47.07) v4(9.98,46.43) v4(9.98,45.8) v4(9.98,45.16) v4(9.98,44.53) v4(9.98,41.99) v4(10.12,125.35) v4(10.33,115.62) v4(10.62,208.99) v4(10.62,207.72) v4(10.62,206.45) v4(10.62,205.18) v4(10.62,201.37) v4(10.62,200.1) v4(10.62,198.83) v4(10.62,195.02) v4(10.62,193.75) v4(10.62,192.48) v4(10.62,188.67) v4(10.62,187.4) v4(10.62,186.13) v4(10.62,182.32) v4(10.62,181.05) v4(10.62,179.78) v4(10.62,175.97) v4(10.62,174.7) v4(10.62,173.43) v4(10.62,169.62) v4(10.62,168.35) v4(10.62,167.08) v4(10.62,163.27) v4(10.62,162) v4(10.62,160.73) v4(10.62,92.15) v4(10.62,90.88) v4(10.62,89.61) v4(10.62,85.8) v4(10.62,84.53) v4(10.62,83.26) v4(10.62,79.45) v4(10.62,78.18) v4(10.62,76.91) v4(10.62,73.1) v4(10.62,71.83) v4(10.62,70.56) v4(10.62,66.75) v4(10.62,65.48) v4(10.62,64.21) v4(10.62,60.4) v4(10.62,59.13) v4(10.62,57.86) v4(10.62,54.05) v4(10.62,52.78) v4(10.62,51.51) v4(10.62,47.7) v4(10.62,46.43) v4(10.62,45.16) v4(10.92,123.64) v4(11.16,135.81) v4(11.16,125.49) v4(11.25,208.99) v4(11.25,208.36) v4(11.25,207.72) v4(11.25,206.45) v4(11.25,205.82) v4(11.25,205.18) v4(11.25,204.55) v4(11.25,202.01) v4(11.25,201.37) v4(11.25,200.1) v4(11.25,199.47) v4(11.25,198.83) v4(11.25,198.2) v4(11.25,195.66) v4(11.25,195.02) v4(11.25,193.75) v4(11.25,193.12) v4(11.25,192.48) v4(11.25,191.85) v4(11.25,189.31) v4(11.25,188.67) v4(11.25,187.4) v4(11.25,186.77) v4(11.25,186.13) v4(11.25,185.5) v4(11.25,182.96) v4(11.25,182.32) v4(11.25,181.05) v4(11.25,180.42) v4(11.25,179.78) v4(11.25,179.15) v4(11.25,176.61) v4(11.25,175.97) v4(11.25,174.7) v4(11.25,174.07) v4(11.25,173.43) v4(11.25,172.8) v4(11.25,170.26) v4(11.25,169.62) v4(11.25,168.35) v4(11.25,167.72) v4(11.25,167.08) v4(11.25,166.45) v4(11.25,163.91) v4(11.25,163.27) v4(11.25,162) v4(11.25,161.37) v4(11.25,160.73) v4(11.25,160.1) v4(11.25,157.56) v4(11.25,92.79) v4(11.25,92.15) v4(11.25,90.88) v4(11.25,90.25) v4(11.25,89.61) v4(11.25,88.98) v4(11.25,86.44) v4(11.25,85.8) v4(11.25,84.53) v4(11.25,83.9) v4(11.25,83.26) v4(11.25,82.63) v4(11.25,80.09) v4(11.25,79.45) v4(11.25,78.18) v4(11.25,77.55) v4(11.25,76.91) v4(11.25,76.28) v4(11.25,73.74) v4(11.25,73.1) v4(11.25,71.83) v4(11.25,71.2) v4(11.25,70.56) v4(11.25,69.93) v4(11.25,67.39) v4(11.25,66.75) v4(11.25,65.48) v4(11.25,64.85) v4(11.25,64.21) v4(11.25,63.58) v4(11.25,61.04) v4(11.25,60.4) v4(11.25,59.13) v4(11.25,58.5) v4(11.25,57.86) v4(11.25,57.23) v4(11.25,54.69) v4(11.25,54.05) v4(11.25,52.78) v4(11.25,52.15) v4(11.25,51.51) v4(11.25,50.88) v4(11.25,48.34) v4(11.25,47.7) v4(11.25,46.43) v4(11.25,45.8) v4(11.25,45.16) v4(11.25,44.53) v4(11.25,41.99) v4(11.32,125.94) v4(11.4,137.66) v4(11.76,113.64) v4(11.89,205.18) v4(11.89,198.83) v4(11.89,192.48) v4(11.89,186.13) v4(11.89,179.78) v4(11.89,173.43) v4(11.89,167.08) v4(11.89,160.73) v4(11.89,89.61) v4(11.89,83.26) v4(11.89,76.91) v4(11.89,70.56) v4(11.89,64.21) v4(11.89,57.86) v4(11.89,51.51) v4(11.89,45.16) v4(11.98,127.71) v4(12.17,79.61) v4(12.52,208.99) v4(12.52,208.36) v4(12.52,205.82) v4(12.52,205.18) v4(12.52,204.55) v4(12.52,202.01) v4(12.52,199.47) v4(12.52,198.83) v4(12.52,198.2) v4(12.52,195.66) v4(12.52,193.12) v4(12.52,192.48) v4(12.52,191.85) v4(12.52,189.31) v4(12.52,186.77) v4(12.52,186.13) v4(12.52,185.5) v4(12.52,182.96) v4(12.52,180.42) v4(12.52,179.78) v4(12.52,179.15) v4(12.52,176.61) v4(12.52,174.07) v4(12.52,173.43) v4(12.52,172.8) v4(12.52,170.26) v4(12.52,167.72) v4(12.52,167.08) v4(12.52,166.45) v4(12.52,163.91) v4(12.52,161.37) v4(12.52,160.73) v4(12.52,160.1) v4(12.52,157.56) v4(12.52,92.79) v4(12.52,90.25) v4(12.52,89.61) v4(12.52,88.98) v4(12.52,86.44) v4(12.52,83.9) v4(12.52,83.26) v4(12.52,82.63) v4(12.52,80.09) v4(12.52,77.55) v4(12.52,76.91) v4(12.52,76.28) v4(12.52,73.74) v4(12.52,71.2) v4(12.52,70.56) v4(12.52,69.93) v4(12.52,67.39) v4(12.52,64.85) v4(12.52,64.21) v4(12.52,63.58) v4(12.52,61.04) v4(12.52,58.5) v4(12.52,57.86) v4(12.52,57.23) v4(12.52,54.69) v4(12.52,52.15) v4(12.52,51.51) v4(12.52,50.88) v4(12.52,48.34) v4(12.52,45.8) v4(12.52,45.16) v4(12.52,44.53) v4(12.52,41.99) v4(12.72,125.64) v4(12.78,135.43) v4(12.82,133.6) v4(12.78,116.66) v4(12.87,137.43) v4(12.92,123.7) v4(13.16,208.99) v4(13.16,205.18) v4(13.16,198.83) v4(13.16,192.48) v4(13.16,186.13) v4(13.16,179.78) v4(13.16,173.43) v4(13.16,167.08) v4(13.16,160.73) v4(13.16,89.61) v4(13.16,83.26) v4(13.16,76.91) v4(13.16,70.56) v4(13.16,64.21) v4(13.16,57.86) v4(13.16,51.51) v4(13.16,45.16) v4(13.25,132.7) v4(13.2,128.61) v4(13.25,122.7) v4(13.2,118.61) v4(13.72,114.06) v4(13.79,208.99) v4(13.79,208.36) v4(13.79,205.82) v4(13.79,205.18) v4(13.79,204.55) v4(13.79,202.01) v4(13.79,199.47) v4(13.79,198.83) v4(13.79,198.2) v4(13.79,195.66) v4(13.79,193.12) v4(13.79,192.48) v4(13.79,191.85) v4(13.79,189.31) v4(13.79,186.77) v4(13.79,186.13) v4(13.79,185.5) v4(13.79,182.96) v4(13.79,180.42) v4(13.79,179.78) v4(13.79,179.15) v4(13.79,176.61) v4(13.79,174.07) v4(13.79,173.43) v4(13.79,172.8) v4(13.79,170.26) v4(13.79,167.72) v4(13.79,167.08) v4(13.79,166.45) v4(13.79,163.91) v4(13.79,161.37) v4(13.79,160.73) v4(13.79,160.1) v4(13.79,157.56) v4(13.79,92.79) v4(13.79,90.25) v4(13.79,89.61) v4(13.79,88.98) v4(13.79,86.44) v4(13.79,83.9) v4(13.79,83.26) v4(13.79,82.63) v4(13.79,80.09) v4(13.79,77.55) v4(13.79,76.91) v4(13.79,76.28) v4(13.79,73.74) v4(13.79,71.2) v4(13.79,70.56) v4(13.79,69.93) v4(13.79,67.39) v4(13.79,64.85) v4(13.79,64.21) v4(13.79,63.58) v4(13.79,58.5) v4(13.79,57.86) v4(13.79,57.23) v4(13.79,54.69) v4(13.79,52.15) v4(13.79,51.51) v4(13.79,50.88) v4(13.79,48.34) v4(13.79,45.8) v4(13.79,45.16) v4(13.79,44.53) v4(13.79,41.99) v4(14.12,154.17) v4(14.12,152.17) v4(14.12,150.17) v4(14.12,148.17) v4(14.19,146.17) v4(14.19,136.93) v4(14.43,205.18) v4(14.43,198.83) v4(14.43,192.48) v4(14.43,186.13) v4(14.43,179.78) v4(14.43,173.43) v4(14.43,167.08) v4(14.43,160.73) v4(14.43,89.61) v4(14.43,83.26) v4(14.43,76.91) v4(14.43,70.56) v4(14.43,64.21) v4(14.43,57.86) v4(14.43,51.51) v4(14.43,45.16) v4(14.59,135.84) v4(14.63,126.22) v4(14.63,115.84) v4(14.62,98.74) v4(14.71,124.59) v4(14.83,103.36) v4(14.83,101.79) v4(14.84,100.12) v4(14.83,97.24) v4(14.91,156.01) v4(15.06,208.99) v4(15.06,208.36) v4(15.06,205.82) v4(15.06,205.18) v4(15.06,204.55) v4(15.06,202.01) v4(15.06,199.47) v4(15.06,198.83) v4(15.06,198.2) v4(15.06,195.66) v4(15.06,193.12) v4(15.06,192.48) v4(15.06,191.85) v4(15.06,189.31) v4(15.06,186.77) v4(15.06,186.13) v4(15.06,185.5) v4(15.06,182.96) v4(15.06,180.42) v4(15.06,179.78) v4(15.06,179.15) v4(15.06,176.61) v4(15.06,174.07) v4(15.06,173.43) v4(15.06,172.8) v4(15.06,170.26) v4(15.06,167.72) v4(15.06,167.08) v4(15.06,166.45) v4(15.06,163.91) v4(15.06,161.37) v4(15.06,160.73) v4(15.06,160.1) v4(15.06,157.56) v4(14.99,129.52) v4(14.99,119.52) v4(14.99,95.32) v4(15.06,92.79) v4(15.06,90.25) v4(15.06,89.61) v4(15.06,88.98) v4(15.06,86.44) v4(15.06,83.9) v4(15.06,83.26) v4(15.06,82.63) v4(15.06,80.09) v4(15.06,77.55) v4(15.06,76.91) v4(15.06,76.28) v4(15.06,73.74) v4(15.06,71.2) v4(15.06,70.56) v4(15.06,69.93) v4(15.06,67.39) v4(15.06,64.85) v4(15.06,64.21) v4(15.06,63.58) v4(15.06,61.04) v4(15.06,58.5) v4(15.06,57.86) v4(15.06,57.23) v4(15.06,54.69) v4(15.06,52.15) v4(15.06,51.51) v4(15.06,50.88) v4(15.06,48.34) v4(15.06,45.8) v4(15.06,45.16) v4(15.06,44.53) v4(15.06,41.99) v4(15.07,131.86) v4(15.07,121.86) v4(15.26,144.48) v4(15.19,126.84) v4(15.24,105.16) v4(15.62,191.51) v4(15.61,182.61) v4(15.64,52.5) v4(15.76,193.47) v4(15.68,170.6) v4(15.68,86.79) v4(15.7,77.9) v4(15.68,74.09) v4(15.68,67.74) v4(15.68,61.39) v4(15.68,55.04) v4(15.68,48.69) v4(15.85,206.18) v4(15.81,189.67) v4(15.85,183.31) v4(15.81,176.97) v4(15.8,176.27) v4(15.81,164.27) v4(15.78,157.77) v4(15.78,75.94) v4(15.82,69.58) v4(15.81,60.69) v4(15.82,42.21) v4(15.96,163.56) v4(15.96,152.29) v4(15.93,150.42) v4(15.9,40.21) v4(15.9,38.21) v4(15.9,36.21) v4(15.9,34.21) v4(15.9,32.21) v4(15.9,30.21) v4(15.93,28.73) v4(16.02,201.66) v4(15.99,154.29) v4(15.98,148.42) v4(16.05,134.47) v4(16.06,93.65) v4(16,92.44) v4(16.05,90.6) v4(16.07,174.42) v4(16.1,146.29) v4(16.08,89.65) v4(16.09,63.24) v4(16.14,44.11) v4(16.21,73.39) v4(16.25,67.04) v4(16.3,168.07) v4(16.33,124.47) v4(16.28,65.2) v4(16.42,208.63) v4(16.4,187.06) v4(16.39,71.55) v4(16.4,46.04) v4(16.56,84.24) v4(16.53,79.74) v4(16.54,26.41) v4(16.64,159.41) v4(16.64,58.74) v4(16.7,195.32) v4(16.67,143.06) v4(16.68,103.38) v4(16.68,101.82) v4(16.68,100.11) v4(16.69,98.78) v4(16.86,199.82) v4(16.77,166.11) v4(16.82,97.43) v4(16.83,80.45) v4(16.91,185.15) v4(16.9,180.66) v4(17.03,178.63) v4(17.06,161.62) v4(16.99,95.39) v4(17.11,188.77) v4(17.11,106.01) v4(17.19,204.21) v4(17.18,202.37) v4(17.26,175.83) v4(17.25,56.52) v4(17.29,155.8) v4(17.27,86.13) v4(17.34,82.29) v4(17.31,50.21) v4(17.28,47.68) v4(17.38,197.26) v4(17.42,171.69) v4(17.42,164) v4(17.46,76.96) v4(17.48,173) v4(17.49,144.85) v4(17.48,87.67) v4(17.51,24.66) v4(17.58,207.18) v4(17.59,191.16) v4(17.65,42.63) v4(17.76,193.47) v4(17.7,182.56) v4(17.74,157.75) v4(17.67,73.85) v4(17.67,61.16) v4(17.75,60.22) v4(17.74,40.63) v4(17.74,38.63) v4(17.74,36.63) v4(17.74,34.63) v4(17.74,32.63) v4(17.74,30.63) v4(17.74,28.63) v4(17.83,210.04) v4(17.78,75.89) v4(17.77,69.14) v4(17.86,51.73) v4(17.88,93.92) v4(17.91,91.32) v4(17.92,89.62) v4(18.02,201.66) v4(18.02,186.37) v4(18.06,57.33) v4(18.02,54.68) v4(18.04,44.58) v4(18.08,141.65) v4(18.1,120.61) v4(18.17,64.53) v4(18.21,62.94) v4(18.27,78.76) v4(18.38,71.31) v4(18.4,26.76) v4(18.51,171.98) v4(18.55,162.76) v4(18.48,160.2) v4(18.54,104.42) v4(18.5,91.9) v4(18.6,177.4) v4(18.62,167.89) v4(18.63,165.38) v4(18.59,158.21) v4(18.59,156.21) v4(18.59,154.21) v4(18.59,151.89) v4(18.59,149.89) v4(18.6,147.89) v4(18.65,67.35) v4(18.62,46.6) v4(18.67,184.2) v4(18.7,87.53) v4(18.68,84.89) v4(18.86,199.82) v4(18.79,195.84) v4(18.83,189.6) v4(18.82,178.74) v4(18.83,170.28) v4(18.83,80.55) v4(18.9,143.44) v4(18.94,49.04) v4(18.92,42.32) v4(18.92,40.32) v4(18.92,38.32) v4(18.92,36.32) v4(18.92,34.32) v4(18.92,32.32) v4(18.93,23.25) v4(18.99,208.59) v4(19.03,95.04) v4(19.12,211.57) v4(19.12,175.47) v4(19.11,106.27) v4(19.16,75.9) v4(19.12,59.79) v4(19.16,53.04) v4(19.18,204.38) v4(19.18,202.42) v4(19.26,82.83) v4(19.18,58.82) v4(19.33,188.22) v4(19.34,74.64) v4(19.27,50.32) v4(19.5,140.24) v4(19.47,55.92) v4(19.55,25.24) v4(19.57,173.52) v4(19.65,146.18) v4(19.61,130.5) v4(19.61,129.5) v4(19.61,128.5) v4(19.61,127.5) v4(19.61,126.5) v4(19.61,125.5) v4(19.61,124.5) v4(19.61,123.5) v4(19.61,122.5) v4(19.61,121.5) v4(19.61,120.5) v4(19.61,119.5) v4(19.61,118.5) v4(19.59,63.12) v4(19.64,30.36) v4(19.76,193.47) v4(19.69,72.69) v4(19.69,65.63) v4(19.83,182.57) v4(19.79,69.89) v4(19.83,61.77) v4(19.95,213.39) v4(19.89,180.57) v4(19.92,170.57) v4(19.95,131.44) v4(19.91,93.31) v4(20.02,201.75) v4(20.02,186.37) v4(20.04,166.47) v4(20.03,163.95) v4(19.98,77.72) v4(20.11,88.94) v4(20.1,86.31) v4(20.22,218.09) v4(20.22,215.72) v4(20.21,209.81) v4(20.22,208.09) v4(20.22,206.09) v4(20.23,177.33) v4(20.25,168.87) v4(20.18,92.6) v4(20.18,90.6) v4(20.18,84.6) v4(20.24,47.53) v4(20.32,220.05) v4(20.32,142.02) v4(20.27,97.02) v4(20.34,21.84) v4(20.43,161.99) v4(20.42,160.17) v4(20.43,158.17) v4(20.43,156.17) v4(20.43,154.17) v4(20.43,149.99) v4(20.46,98.67) v4(20.51,179.66) v4(20.47,147.99) v4(20.56,100.66) v4(20.66,132.15) v4(20.57,81.53) v4(20.58,51.62) v4(20.69,48.91) v4(20.76,45.59) v4(20.73,42.98) v4(20.76,40.98) v4(20.76,35.59) v4(20.76,33.59) v4(20.84,200.09) v4(20.82,197.86) v4(20.79,195.86) v4(20.79,150.95) v4(20.88,203.47) v4(20.91,138.82) v4(20.89,54.5) v4(20.96,23.82) v4(21.04,188.22) v4(20.99,172.11) v4(21.03,130.52) v4(21.03,129.52) v4(21.03,128.52) v4(21.03,127.52) v4(21.03,126.52) v4(21.03,125.52) v4(21.03,124.52) v4(21.03,123.52) v4(21.03,122.52) v4(21.03,121.52) v4(21.03,120.52) v4(21.03,119.52) v4(21,117.06) v4(21,61.71) v4(21,60.15) v4(20.97,39.15) v4(21.04,31.57) v4(21.11,106.27) v4(21.08,104.42) v4(21.14,102.57) v4(21.15,75.99) v4(21.14,73.77) v4(21.1,64.22) v4(21.26,164.89) v4(21.19,144.9) v4(21.24,58.16) v4(21.33,221.77) v4(21.33,169.15) v4(21.31,162.89) v4(21.31,160.89) v4(21.31,158.89) v4(21.31,156.89) v4(21.35,154.89) v4(21.36,132.85) v4(21.29,68.57) v4(21.3,35.45) v4(21.45,118.61) v4(21.37,29.62) v4(21.5,203.1) v4(21.65,175.91) v4(21.66,167.45) v4(21.61,70.9) v4(21.71,152.63) v4(21.73,140.61) v4(21.73,78.69) v4(21.81,199.59) v4(21.82,194.08) v4(21.82,83.09) v4(21.77,47.22) v4(21.77,45.22) v4(21.77,43.22) v4(21.77,41.22) v4(21.81,20.57) v4(21.93,178.24) v4(21.92,146.61) v4(21.96,116.77) v4(21.95,75.59) v4(22.06,217.72) v4(22.06,215.72) v4(22.06,213.12) v4(22.06,211.12) v4(22.06,209.12) v4(22.06,207.12) v4(22.01,205.12) v4(22.02,186.37) v4(22.03,96.47) v4(22.03,95.08) v4(22.03,93.08) v4(22.03,91.08) v4(22.03,87.08) v4(22.03,85.08) v4(22.01,55.99) v4(21.99,50.21) v4(22.14,219.68) v4(22.16,130.88) v4(22.16,129.88) v4(22.16,126.31) v4(22.16,125.31) v4(22.1,39.25) v4(22.09,37.3) v4(22.2,149.54) v4(22.19,133.42) v4(22.18,127.31) v4(22.26,115.81) v4(22.23,104.26) v4(22.33,137.41) v4(22.3,98.61) v4(22.28,67.94) v4(22.34,65.94) v4(22.3,53.09) v4(22.38,201.37) v4(22.4,170.69) v4(22.45,118.69) v4(22.42,106.28) v4(22.42,100.61) v4(22.39,22.42) v4(22.56,153.38) v4(22.48,131.98) v4(22.48,128.93) v4(22.63,204.75) v4(22.64,195.9) v4(22.58,166.54) v4(22.57,124.4) v4(22.57,60.46) v4(22.74,223.19) v4(22.73,210.74) v4(22.73,208.74) v4(22.73,206.74) v4(22.68,197.74) v4(22.75,167.74) v4(22.67,62.65) v4(22.71,34.04) v4(22.79,77.14) v4(22.89,128.02) v4(22.94,91.77) v4(22.92,89.14) v4(22.92,72.41) v4(23.04,188.22) v4(22.97,115.11) v4(23.16,161.88) v4(23.16,159.88) v4(23.16,157.88) v4(23.15,155.29) v4(23.12,151.22) v4(23.1,139.24) v4(23.16,119.4) v4(23.15,80.1) v4(23.08,69.94) v4(23.2,174.65) v4(23.19,144.75) v4(23.19,133.42) v4(23.18,102.46) v4(23.19,29.61) v4(23.28,200.95) v4(23.34,176.83) v4(23.28,123.69) v4(23.33,48.73) v4(23.39,221.21) v4(23.38,212.63) v4(23.42,54.57) v4(23.56,130.83) v4(23.56,129.83) v4(23.56,126.71) v4(23.56,125.71) v4(23.55,116.76) v4(23.49,35.87) v4(23.64,182.37) v4(23.61,148.12) v4(23.61,46.74) v4(23.61,44.74) v4(23.61,42.74) v4(23.6,41.1) v4(23.59,31.51) v4(23.74,202.84) v4(23.68,114.4) v4(23.72,74.24) v4(23.67,64.45) v4(23.71,51.67) v4(23.76,20.2) v4(23.81,223.94) v4(23.82,169.28) v4(23.79,98.22) v4(23.82,38.23) v4(23.91,146.71) v4(23.92,135.86) v4(23.89,120.08) v4(23.89,76.09) v4(23.88,55.82) v4(24.04,199.21) v4(24.02,186.37) v4(23.99,165.12) v4(24.02,162.49) v4(24,124.89) v4(24.06,123.06) v4(24.06,122.06) v4(24.06,121.06) v4(23.97,32.79) v4(24.16,166.32) v4(24.08,131.68) v4(24.1,115.93) v4(24.08,85.87) v4(24.08,83.87) v4(24.08,81.87) v4(24.12,67.21) v4(24.19,184.34) v4(24.19,133.42) v4(24.21,106.26) v4(24.21,78.55) v4(24.29,202.07) v4(24.36,160.51) v4(24.36,158.51) v4(24.36,156.28) v4(24.27,129.12) v4(24.27,117.25) v4(24.33,90.56) v4(24.36,43.03) v4(24.39,204.2) v4(24.44,180.41) v4(24.46,127.64) v4(24.39,22.03) v4(24.56,209.03) v4(24.55,170.67) v4(24.55,153.21) v4(24.54,149.81) v4(24.56,137.78) v4(24.5,103.95) v4(24.51,87.82) v4(24.56,60.28) v4(24.51,57.72) v4(24.56,41.42) v4(24.57,210.69) v4(24.57,206.69) v4(24.66,114.24) v4(24.58,97.22) v4(24.59,62.13) v4(24.66,53.98) v4(24.74,95.24) v4(24.75,71.04) v4(24.75,40.07) v4(24.78,214.06) v4(24.78,145.06) v4(24.84,53.16) v4(24.94,220.27) v4(24.94,195.03) v4(24.91,34.45) v4(25.04,188.22) v4(25.06,172.6) v4(25.03,132.01) v4(24.98,117.96) v4(25.04,107.1) v4(25.06,30.39) v4(25.07,193.74) v4(25.08,77.87) v4(25.26,176.27) v4(25.18,174.43) v4(25.23,167.87) v4(25.19,133.42) v4(25.25,128.97) v4(25.2,115.63) v4(25.24,99.01) v4(25.18,97.01) v4(25.18,95.01) v4(25.31,205.97) v4(25.28,168.81) v4(25.28,50.43) v4(25.43,165.23) v4(25.41,163.71) v4(25.37,38.22) v4(25.5,225.02) v4(25.53,197.06) v4(25.47,125.79) v4(25.47,124.79) v4(25.47,123.13) v4(25.47,122.13) v4(25.47,121.13) v4(25.47,120.13) v4(25.59,191.82) v4(25.64,183.11) v4(25.62,135.18) v4(25.62,126.78) v4(25.66,114.24) v4(25.58,72.86) v4(25.68,212.35) v4(25.69,204.12) v4(25.71,203.49) v4(25.72,181.76) v4(25.67,146.08) v4(25.67,118.68) v4(25.75,91.97) v4(25.7,80.36) v4(25.72,74.24) v4(25.72,68.42) v4(25.67,64.32) v4(25.76,20.2) v4(25.77,76.85) v4(25.83,66.16) v4(25.94,185.17) v4(25.91,89.25) v4(25.93,86) v4(25.93,84) v4(25.91,82.27) v4(25.97,219.39) v4(26.03,209.16) v4(26,207.18) v4(26.03,195.19) v4(26.02,186.39) v4(26.06,154.45) v4(26.02,149.28) v4(26.04,137.2) v4(26.03,132.01) v4(26.01,104.2) v4(26.03,22.25) v4(26.15,199.52) v4(26.19,215.48) v4(26.17,161.86) v4(26.19,133.42) v4(26.25,128.97) v4(26.2,115.63) v4(26.18,100.78) v4(26.22,79.53) v4(26.2,44.19) v4(26.22,42.35) v4(26.31,166.86) v4(26.27,157.86) v4(26.33,127.49) v4(26.32,46.19) v4(26.29,34.15) v4(26.46,221.32) v4(26.4,193.66) v4(26.41,179.89) v4(26.42,159.33) v4(26.44,124.52) v4(26.46,108.51) v4(26.37,62.45) v4(26.43,58.27) v4(26.47,161.26) v4(26.5,123.13) v4(26.47,120.08) v4(26.49,60.35) v4(26.47,55.29) v4(26.49,52.04) v4(26.64,223.54) v4(26.66,114.24) v4(26.59,70.31) v4(26.59,53.44) v4(26.74,201.91) v4(26.67,164.53) v4(26.67,118.68) v4(26.87,189.01) v4(26.91,145.01) v4(26.89,40.07) v4(26.96,29.8) v4(27.03,132.01) v4(27.02,97.57) v4(27.02,95.57) v4(26.97,87.71) v4(27.07,225.74) v4(27.09,213.77) v4(27.15,181.73) v4(27.07,179.13) v4(27.07,177.13) v4(27.18,174.45) v4(27.19,168.24) v4(27.19,133.42) v4(27.25,128.97) v4(27.18,127.48) v4(27.2,115.63) v4(27.3,205.75) v4(27.32,90.67) v4(27.35,72.04) v4(27.27,50.19) v4(27.44,124.52) v4(27.43,74.22) v4(27.37,38.22) v4(27.47,156.26) v4(27.51,153.62) v4(27.5,123.13) v4(27.47,120.08) v4(27.52,99.51) v4(27.48,76.12) v4(27.61,216.89) v4(27.59,191.82) v4(27.66,114.24) v4(27.63,52.74) v4(27.67,118.68) v4(27.73,65.55) v4(27.74,31.63) v4(27.79,187.32) v4(27.79,170.09) v4(27.85,127.28) v4(27.87,109.93) v4(28.01,200.27) v4(28.06,164.09) v4(28.03,132.01) v4(28.11,144.17) v4(28.23,224.21) v4(28.19,133.42) v4(28.25,128.97) v4(28.2,115.63) v4(28.24,79.53) v4(28.22,63.62) v4(28.29,190.42) v4(28.35,166.95) v4(28.4,193.66) v4(28.44,124.52) v4(28.38,89.12) v4(28.38,77.06) v4(28.44,54.96) v4(28.37,28.38) v4(28.51,215.18) v4(28.5,126.52) v4(28.5,125.52) v4(28.5,123.08) v4(28.5,122.08) v4(28.5,121.08) v4(28.47,120.08) v4(28.51,66.71) v4(28.51,64.71) v4(28.51,62.71) v4(28.55,60.4) v4(28.58,203.73) v4(28.59,202.18) v4(28.61,118.35) v4(28.66,114.24) v4(28.76,175.69) v4(28.75,108.2) v4(28.7,40.92) v4(28.95,226.4) v4(28.91,181.01) v4(28.91,179.01) v4(28.91,177.01) v4(28.88,154.85) v4(28.92,152.2) v4(28.95,100.91) v4(28.99,145.79) v4(29.03,132.01) v4(29.15,30.21) v4(29.21,188.73) v4(29.19,133.42) v4(29.25,128.97) v4(29.2,115.63) v4(29.18,111.21) v4(29.2,39.04) v4(29.32,117.64) v4(29.32,102.92) v4(29.27,50.19) v4(29.44,205.84) v4(29.46,52.03) v4(29.51,91.4) v4(29.5,68.56) v4(29.66,114.24) v4(29.6,74.92) v4(29.67,169.42) v4(29.85,143.18) v4(29.82,53.32) v4(29.79,26.97) v4(29.92,165.77) v4(29.92,127.22) v4(29.92,126.22) v4(29.92,125.22) v4(29.92,123.13) v4(29.92,122.13) v4(29.92,121.13) v4(29.92,120.13) v4(29.92,78.54) v4(30.06,163.93) v4(30.03,132.01) v4(30.02,116.93) v4(29.98,55.52) v4(30.13,224.81) v4(30.16,109.61) v4(30.1,61.67) v4(30.2,204) v4(30.19,133.42) v4(30.25,128.97) v4(30.2,115.63) v4(30.22,76.83) v4(30.36,215.93) v4(30.31,190.4) v4(30.31,167.52) v4(30.3,153.43) v4(30.33,150.79) v4(30.28,118.69) v4(30.33,89.56) v4(30.35,65.65) v4(30.35,63.65) v4(30.38,192.4) v4(30.56,28.8) v4(30.64,124.52) v4(30.66,114.24) v4(30.72,217.78) v4(30.72,144.8) v4(30.68,41.21) v4(30.8,183.28) v4(30.9,226.82) v4(30.87,181.43) v4(30.92,120.08) v4(30.94,101.08) v4(30.89,80.41) v4(31.03,194.89) v4(31.03,132.01) v4(31.01,116.77) v4(31.09,127.57) v4(31.08,118.68) v4(31.12,112.17) v4(31.19,133.42) v4(31.25,128.97) v4(31.2,115.63) v4(31.17,50.81) v4(31.17,39.36) v4(31.32,102.92) v4(31.44,205.84) v4(31.41,165.77) v4(31.51,91.4) v4(31.64,124.52) v4(31.66,114.24) v4(31.59,113.24) v4(31.71,152.02) v4(31.69,142.4) v4(31.75,67.08) v4(31.67,54.75) v4(31.67,52.75) v4(31.81,169.38) v4(31.81,167.38) v4(31.82,123.13) v4(31.85,120.44) v4(31.8,110.4) v4(31.84,26.42) v4(32.05,164.01) v4(32.03,132.01) v4(31.98,127.12) v4(32.01,116.77) v4(32.1,225.13) v4(32.08,118.68) v4(32.2,204) v4(32.19,133.42) v4(32.25,128.97) v4(32.2,115.63) v4(32.22,57.34) v4(32.36,215.93) v4(32.27,193.06) v4(32.35,149.73) v4(32.3,148.36) v4(32.31,137.73) v4(32.34,136.36) v4(32.34,94.73) v4(32.31,93.36) v4(32.33,89.56) v4(32.32,82.73) v4(32.34,81.36) v4(32.36,78.57) v4(32.28,41.21) v4(32.37,126.2) v4(32.37,125.2) v4(32.37,122.29) v4(32.37,121.29) v4(32.44,109.44) v4(32.43,58.73) v4(32.54,196.36) v4(32.47,46.73) v4(32.49,28.27) v4(32.62,220.36) v4(32.58,144.05) v4(32.67,185.73) v4(32.74,160.36) v4(32.68,105.36) v4(32.67,34.73) v4(32.77,209.73) v4(32.8,183.28) v4(32.85,173.73) v4(32.86,172.36) v4(32.86,171.09) v4(32.79,117.39) v4(32.78,69.36) v4(32.79,21.36) v4(32.93,208.36) v4(32.87,181.43) v4(32.96,161.73) v4(32.94,101.08) v4(32.92,70.73) v4(32.91,22.73) v4(33.06,221.73) v4(33.03,194.9) v4(33.01,184.36) v4(33.03,132.01) v4(33.01,106.73) v4(33.02,33.36) v4(33.09,227.01) v4(33.13,202.22) v4(33.13,197.73) v4(33.11,112.27) v4(33.14,108.73) v4(33.1,102.94) v4(33.16,93.36) v4(33.26,217.74) v4(33.24,200.23) v4(33.19,133.42) v4(33.25,128.97) v4(33.2,115.63) v4(33.17,113.45) v4(33.22,57.34) v4(33.19,45.36) v4(33.17,39.36) v4(33.35,149.74) v4(33.29,148.19) v4(33.3,137.9) v4(33.34,136.34) v4(33.32,82.73) v4(33.34,81.35) v4(33.44,205.74) v4(33.43,127.61) v4(33.46,68.93) v4(33.43,58.74) v4(33.54,196.34) v4(33.56,191.53) v4(33.56,189.53) v4(33.52,165.38) v4(33.5,118.1) v4(33.51,94.75) v4(33.51,91.4) v4(33.49,56.91) v4(33.47,46.74) v4(33.62,220.34) v4(33.65,167.37) v4(33.61,141.85) v4(33.64,55.06) v4(33.67,185.74) v4(33.69,169.37) v4(33.74,160.34) v4(33.71,151.84) v4(33.68,105.34) v4(33.75,67.08) v4(33.71,41.21) v4(33.67,34.74) v4(33.71,26.42) v4(33.77,209.74) v4(33.85,187.55) v4(33.83,173.88) v4(33.86,172.34) v4(33.85,125.23) v4(33.85,123.13) v4(33.85,122.13) v4(33.85,121.13) v4(33.85,120.13) v4(33.85,108.03) v4(33.78,69.34) v4(33.79,21.34) v4(33.93,208.34) v4(33.96,161.74) v4(33.91,124.54) v4(33.88,114.16) v4(33.92,70.74) v4(33.91,22.74) v4(34.06,221.74) v4(34.01,184.34) v4(33.99,150.01) v4(34.04,147.53) v4(34,138.61) v4(34.03,132.01) v4(34,126.22) v4(33.99,110.42) v4(34.01,106.75) v4(34.02,33.34) v4(34.13,197.74) v4(34.08,109.79) v4(34.16,93.34) v4(34.09,44.93) v4(34.23,215.2) v4(34.22,149.26) v4(34.22,136.82) v4(34.19,133.42) v4(34.25,128.97) v4(34.2,115.64) v4(34.22,98.45) v4(34.22,97.45) v4(34.22,96.45) v4(34.22,95.45) v4(34.18,89.39) v4(34.22,57.34) v4(34.31,225.2) v4(34.31,118.68) v4(34.32,82.74) v4(34.34,81.34) v4(34.43,58.74) v4(34.45,46.54) v4(34.54,196.25) v4(34.54,174.59) v4(34.51,143.54) v4(34.53,104.81) v4(34.54,99.87) v4(34.49,28.27) v4(34.62,220.34) v4(34.64,198.8) v4(34.61,80.43) v4(34.63,78.56) v4(34.67,185.74) v4(34.74,172.81) v4(34.74,160.34) v4(34.71,126.93) v4(34.67,34.74) v4(34.77,209.74) v4(34.86,204.33) v4(34.83,171.41) v4(34.85,139.14) v4(34.85,124.54) v4(34.85,120.08) v4(34.84,107.88) v4(34.78,69.34) v4(34.8,44.22) v4(34.79,21.34) v4(34.93,208.34) v4(34.88,194.13) v4(34.94,183.27) v4(34.87,181.4) v4(34.9,179.4) v4(34.96,161.74) v4(34.92,137.53) v4(34.87,114.23) v4(34.95,109.29) v4(34.94,106.39) v4(34.92,70.74) v4(34.91,22.74) v4(35.06,221.74) v4(34.98,202.34) v4(35.01,184.34) v4(35.04,147.53) v4(35.03,132.01) v4(35.06,93.75) v4(35.04,38.65) v4(35.01,33.22) v4(35.09,227.04) v4(35.09,216.93) v4(35.12,197.64) v4(35.11,112.27) v4(35.07,101.95) v4(35.16,45.84) v4(35.14,40.89) v4(35.24,195.54) v4(35.25,175.29) v4(35.19,153.18) v4(35.17,148.94) v4(35.19,133.42) v4(35.25,128.97) v4(35.2,115.64) v4(35.23,104.1) v4(35.22,57.34) v4(35.31,118.68) v4(35.32,82.74) v4(35.34,81.34) v4(35.41,192.2) v4(35.41,190.2) v4(35.45,173.52) v4(35.45,90.72) v4(35.46,68.93) v4(35.43,58.74) v4(35.52,186.45) v4(35.49,56.91) v4(35.5,43.52) v4(35.5,32.35) v4(35.62,220.34) v4(35.66,213.81) v4(35.63,168.9) v4(35.58,141.52) v4(35.66,123.13) v4(35.65,105.68) v4(35.63,97.58) v4(35.63,96.58) v4(35.63,95.58) v4(35.63,94.58) v4(35.64,55.06) v4(35.65,34.55) v4(35.61,31.35) v4(35.67,185.74) v4(35.75,166.91) v4(35.74,160.34) v4(35.76,126.92) v4(35.69,124.52) v4(35.73,77) v4(35.75,67.03) v4(35.77,209.74) v4(35.84,200.53) v4(35.83,196.93) v4(35.79,151.18) v4(35.85,139.14) v4(35.85,120.08) v4(35.84,107.88) v4(35.81,87.79) v4(35.78,69.34) v4(35.79,21.34) v4(35.93,208.34) v4(35.95,194.84) v4(35.89,177.66) v4(35.96,161.74) v4(35.9,137.72) v4(35.87,114.23) v4(35.95,109.29) v4(35.92,70.74) v4(35.94,65.04) v4(35.87,45.13) v4(36.06,221.74) v4(35.97,188.28) v4(36.01,184.34) v4(36,175.96) v4(36.04,147.53) v4(36.03,132.01) v4(35.99,110.42) v4(35.98,103.43) v4(35.99,53.09) v4(36.16,174.23) v4(36.13,150.22) v4(36.13,149.22) v4(36.13,136.75) v4(36.13,135.75) v4(36.13,134.75) v4(36.13,133.75) v4(36.07,98.58) v4(36.13,95.22) v4(36.13,94.22) v4(36.13,93.22) v4(36.13,92.22) v4(36.08,26.42) v4(36.25,128.97) v4(36.2,115.64) v4(36.25,75.07) v4(36.22,57.34) v4(36.21,42.81) v4(36.31,225.2) v4(36.31,118.68) v4(36.36,104.98) v4(36.32,82.74) v4(36.34,81.34) v4(36.36,33.84) v4(36.31,30.64) v4(36.4,126.31) v4(36.39,63.09) v4(36.43,58.74) v4(36.46,38.42) v4(36.51,215.53) v4(36.54,196.23) v4(36.51,182.24) v4(36.5,151.15) v4(36.51,146.65) v4(36.49,143.29) v4(36.56,124.52) v4(36.51,102.39) v4(36.48,100.53) v4(36.47,79.81) v4(36.56,50.77) v4(36.49,40.27) v4(36.49,28.27) v4(36.62,220.34) v4(36.64,198.8) v4(36.66,194.13) v4(36.61,154.6) v4(36.59,125.52) v4(36.59,122.76) v4(36.59,121.76) v4(36.59,120.76) v4(36.66,96.07) v4(36.58,91.33) v4(36.58,44.42) v4(36.72,202.33) v4(36.67,185.74) v4(36.75,180.26) v4(36.75,170.85) v4(36.74,160.34) v4(36.77,209.74) v4(36.77,190.11) v4(36.85,139.14) v4(36.85,112.27) v4(36.84,107.88) v4(36.78,69.34) v4(36.79,21.34) v4(36.93,208.34) v4(36.96,161.74) v4(36.95,117.91) v4(36.87,114.23) v4(36.95,109.29) v4(36.92,70.74) v4(36.89,33) v4(36.93,32) v4(36.91,22.74) v4(37.06,221.74) v4(37.01,184.34) v4(37,175.96) v4(37.03,132.01) v4(36.98,103.43) v4(37.06,100.98) v4(37.02,29.94) v4(37.07,227.12) v4(37.1,174.56) v4(37.08,89.1) v4(37.08,80.68) v4(37.16,42.48) v4(37.24,195.52) v4(37.19,165.52) v4(37.21,152.59) v4(37.2,151.86) v4(37.22,145.94) v4(37.25,128.97) v4(37.2,115.64) v4(37.17,86.59) v4(37.22,57.34) v4(37.36,193.42) v4(37.35,104.85) v4(37.29,90.63) v4(37.27,82.46) v4(37.29,68.11) v4(37.32,56.12) v4(37.37,96.78) v4(37.43,58.74) v4(37.41,43.88) v4(37.47,186.88) v4(37.48,168.99) v4(37.53,149.37) v4(37.53,136.6) v4(37.53,135.6) v4(37.53,134.6) v4(37.51,102.39) v4(37.53,94.13) v4(37.53,93.13) v4(37.53,78.04) v4(37.62,220.34) v4(37.6,213.2) v4(37.61,147.53) v4(37.58,141.42) v4(37.62,137.59) v4(37.65,117.2) v4(37.64,31.29) v4(37.67,185.74) v4(37.74,160.34) v4(37.68,150.36) v4(37.71,139.66) v4(37.68,95.11) v4(37.74,92.15) v4(37.77,209.74) v4(37.84,107.88) v4(37.79,79.97) v4(37.78,69.34) v4(37.78,66.17) v4(37.84,54.83) v4(37.86,53.51) v4(37.86,50.42) v4(37.85,26.42) v4(37.93,208.34) v4(37.95,194.81) v4(37.88,177.42) v4(37.96,161.74) v4(37.87,114.23) v4(37.95,109.29) v4(37.92,70.74) v4(37.9,52.24) v4(37.91,22.74) v4(38,225.2) v4(38.06,221.74) v4(37.98,215.18) v4(38.02,203.21) v4(38.06,200.21) v4(38.02,191.16) v4(38.01,184.34) v4(38.02,179.27) v4(38,175.96) v4(38.02,167.27) v4(38.02,155.24) v4(38.03,153.35) v4(38,152.46) v4(38.03,145.35) v4(38.02,143.27) v4(38.06,133.75) v4(38.03,132.01) v4(38.05,126.66) v4(38.05,125.66) v4(38.05,124.66) v4(38.05,123.13) v4(38.05,122.13) v4(38.05,121.13) v4(38.02,112.27) v4(37.99,110.42) v4(37.98,103.43) v4(38.06,100.98) v4(38.02,100.27) v4(38.02,98.42) v4(38.02,88.27) v4(38.02,86.42) v4(38.04,83.81) v4(38.04,82.81) v4(38.04,81.81) v4(38.02,76.27) v4(38.02,74.42) v4(38.02,64.26) v4(38.02,62.42) v4(38.02,40.27) v4(38.02,38.42) v4(38.01,29.78) v4(38.02,28.27) v4(38.1,174.56) v4(38.15,90.11) v4(38.16,42.48) v4(38.26,192.98) v4(38.25,128.97) v4(38.17,118.68) v4(38.2,115.64) v4(38.22,57.31) v4(38.35,188.67) v4(38.32,146.82) v4(38.35,104.85) v4(38.27,97.22) v4(38.39,151.07) v4(38.43,148.94) v4(38.38,127.58) v4(38.37,120.18) v4(38.4,116.54) v4(38.39,95.82) v4(38.43,58.74) v4(38.41,43.88) v4(38.49,138.35) v4(38.51,102.39) v4(38.51,91.5) v4(38.49,79.26) v4(38.62,220.34) v4(38.58,84.65) v4(38.64,68.83) v4(38.63,31.18) v4(38.67,185.74) v4(38.74,160.34) v4(38.69,147.53) v4(38.7,139.76) v4(38.67,67.83) v4(38.69,52.5) v4(38.77,209.74) v4(38.85,194.37) v4(38.84,107.88) v4(38.79,21.34) v4(38.93,208.34) v4(38.96,161.74) v4(38.96,123.13) v4(38.88,117.97) v4(38.87,114.23) v4(38.95,109.29) v4(38.9,70.55) v4(38.93,56.6) v4(38.91,22.74) v4(39.06,221.74) v4(39.01,184.34) v4(39,175.96) v4(39,152.46) v4(39.03,145.35) v4(39.02,134) v4(39.03,132.01) v4(39.04,124.52) v4(38.98,103.43) v4(39.01,29.78) v4(39.1,174.56) v4(39.15,90.11) v4(39.16,42.48) v4(39.26,192.98) v4(39.25,128.97) v4(39.2,115.64) v4(39.2,78.56) v4(39.29,151.08) v4(39.32,146.75) v4(39.36,120.08) v4(39.35,104.85) v4(39.27,97.22) v4(39.29,85.36) v4(39.29,67.04) v4(39.29,58.22) v4(39.43,148.94) v4(39.37,127.57) v4(39.4,116.54) v4(39.43,82.7) v4(39.43,81.7) v4(39.43,80.7) v4(39.41,43.88) v4(39.49,138.35) v4(39.51,102.39) v4(39.51,91.5) v4(39.53,31.63) v4(39.62,220.34) v4(39.64,118.68) v4(39.59,83.68) v4(39.61,69.84) v4(39.64,55.9) v4(39.76,186.27) v4(39.67,185.74) v4(39.75,184.33) v4(39.74,160.34) v4(39.69,147.53) v4(39.7,139.76) v4(39.73,134.71) v4(39.7,95.82) v4(39.77,209.74) v4(39.85,194.37) v4(39.84,107.88) v4(39.79,21.34) v4(39.93,208.34) v4(39.96,161.74) v4(39.96,123.13) v4(39.88,117.95) v4(39.87,114.23) v4(39.95,109.29) v4(39.91,79.82) v4(39.94,32.54) v4(39.96,30.08) v4(39.91,22.74) v4(40.06,221.74) v4(40,175.96) v4(40,152.46) v4(40.03,145.35) v4(40.03,132.01) v4(40.04,124.52) v4(39.98,103.43) v4(40.06,100.98) v4(40.06,78.04) v4(39.99,66.33) v4(39.99,57.51) v4(40.04,33.53) v4(40.1,174.56) v4(40.15,90.11) v4(40.07,68.95) v4(40.16,42.48) v4(40.26,192.98) v4(40.19,151.07) v4(40.25,128.97) v4(40.2,115.64) v4(40.19,85.79) v4(40.3,183.35) v4(40.32,146.75) v4(40.36,120.08) v4(40.35,104.85) v4(40.27,97.22) v4(40.29,84.39) v4(40.32,67.98) v4(40.34,55.19) v4(40.38,187.06) v4(40.43,148.94) v4(40.44,135.42) v4(40.37,127.57) v4(40.4,116.54) v4(40.41,43.88) v4(40.49,138.35) v4(40.51,102.39) v4(40.51,91.5) v4(40.62,220.34) v4(40.64,118.68) v4(40.74,160.34) v4(40.69,147.53) v4(40.7,139.76) v4(40.7,95.82) v4(40.7,56.81) v4(40.74,34.24) v4(40.67,30.79) v4(40.77,209.74) v4(40.85,194.37) v4(40.86,133.84) v4(40.77,133.4) v4(40.84,107.88) v4(40.84,79.44) v4(40.79,21.34) v4(40.93,208.34) v4(40.96,161.74) v4(40.9,131.73) v4(40.9,130.73) v4(40.9,129.73) v4(40.96,123.13) v4(40.88,117.95) v4(40.87,114.23) v4(40.95,109.29) v4(40.93,65.98) v4(40.91,22.74) v4(41.06,221.74) v4(41.01,182.64) v4(41,175.96) v4(41,152.46) v4(41.03,145.35) v4(41.04,124.52) v4(40.98,103.43) v4(41.06,78.04) v4(41.09,187.77) v4(41.11,185.74) v4(41.1,174.56) v4(41.12,150.42) v4(41.11,149.68) v4(41.12,148.95) v4(41.15,90.11) v4(41.11,67.37) v4(41.11,54.55) v4(41.16,42.48) v4(41.26,192.98) v4(41.2,115.64) v4(41.19,85.79) v4(41.32,146.75) v4(41.28,135.96) v4(41.36,120.08) v4(41.35,104.85) v4(41.27,97.22) v4(41.34,32.53) v4(41.34,31.53) v4(41.43,151.08) v4(41.37,127.57) v4(41.4,116.54) v4(41.39,84.42) v4(41.41,56.1) v4(41.41,43.88) v4(41.45,34.95) v4(41.49,138.35) v4(41.51,102.39) v4(41.51,91.5) v4(41.62,220.34) v4(41.6,184.34) v4(41.57,134.55) v4(41.64,118.61) v4(41.74,160.34) v4(41.7,139.76) v4(41.7,95.82) v4(41.73,33.25) v4(41.77,209.74) v4(41.85,194.37) v4(41.83,188.02) v4(41.78,186.44) v4(41.83,183.77) v4(41.77,133.41) v4(41.84,121.96) v4(41.84,120.96) v4(41.84,107.88) v4(41.84,79.44) v4(41.79,21.34) v4(41.93,208.34) v4(41.96,161.74) v4(41.94,122.95) v4(41.87,114.23) v4(41.95,109.29) v4(41.93,65.98) v4(41.91,22.74) v4(42.06,221.74) v4(42,175.96) v4(42,152.46) v4(42.03,145.35) v4(42.04,124.52) v4(41.98,103.43) v4(42.06,100.98) v4(42.06,78.04) v4(42.11,185.74) v4(42.1,174.56) v4(42.15,90.11) v4(42.11,67.37) v4(42.11,54.55) v4(42.16,42.48) v4(42.26,192.98) v4(42.17,182.26) v4(42.19,117.16) v4(42.2,115.64) v4(42.19,85.79) v4(42.28,135.96) v4(42.31,130.31) v4(42.35,104.85) v4(42.27,97.22) v4(42.46,131.3) v4(42.37,127.57) v4(42.39,84.42) v4(42.4,55.94) v4(42.41,43.88) v4(42.4,36.27) v4(42.4,35.27) v4(42.39,33.73) v4(42.4,32.54) v4(42.51,149.37) v4(42.49,138.35) v4(42.51,102.39) v4(42.51,91.5) v4(42.62,220.34) v4(42.65,186.63) v4(42.6,184.34) v4(42.64,150.36) v4(42.65,147.53) v4(42.74,160.34) v4(42.7,139.76) v4(42.7,95.82) v4(42.77,209.74) v4(42.85,194.37) v4(42.83,188.02) v4(42.77,183.58) v4(42.77,133.42) v4(42.77,129.42) v4(42.84,107.88) v4(42.84,79.44) v4(42.79,21.34) v4(42.93,208.34) v4(42.96,161.74) v4(42.96,134.55) v4(42.89,117.87) v4(42.87,114.23) v4(42.95,109.29) v4(42.89,68.01) v4(42.92,66.07) v4(42.9,31.67) v4(42.89,22.93) v4(43.06,221.74) v4(43,175.96) v4(43,152.46) v4(43.03,145.35) v4(43.04,124.52) v4(42.98,103.43) v4(43.06,78.04) v4(43.04,37.04) v4(43.11,185.74) v4(43.1,174.56) v4(43.15,90.11) v4(43.12,72.98) v4(43.12,71.98) v4(43.12,70.98) v4(43.12,69.98) v4(43.12,68.98) v4(43.11,54.55) v4(43.16,42.48) v4(43.26,192.98) v4(43.17,182.18) v4(43.17,132.01) v4(43.25,121.42) v4(43.25,120.42) v4(43.2,115.64) v4(43.19,85.79) v4(43.34,151.07) v4(43.34,146.8) v4(43.28,135.96) v4(43.35,104.85) v4(43.27,97.22) v4(43.41,148.94) v4(43.46,138.35) v4(43.37,127.56) v4(43.4,122.41) v4(43.39,84.42) v4(43.4,55.94) v4(43.41,43.88) v4(43.47,118.68) v4(43.51,102.39) v4(43.51,91.5) v4(43.62,220.34) v4(43.65,186.63) v4(43.6,184.34) v4(43.65,147.53) v4(43.64,73.83) v4(43.63,66.77) v4(43.61,30.97) v4(43.6,23.63) v4(43.74,160.34) v4(43.74,139.75) v4(43.67,128.98) v4(43.7,95.82) v4(43.74,37.75) v4(43.7,21.76) v4(43.77,209.74) v4(43.85,194.37) v4(43.83,188.02) v4(43.77,183.58) v4(43.77,133.42) v4(43.84,107.88) v4(43.84,79.44) v4(43.8,35.13) v4(43.81,33.5) v4(43.81,32.74) v4(43.93,208.34) v4(43.96,161.74) v4(43.96,134.55) v4(43.87,114.23) v4(43.95,109.29) v4(43.94,47.42) v4(43.94,46.42) v4(43.94,45.42) v4(43.94,44.48) v4(44.06,221.74) v4(44,175.96) v4(44,152.46) v4(44.03,145.35) v4(44.04,124.53) v4(43.98,103.43) v4(44.06,78.04) v4(43.99,54.08) v4(44.06,36.09) v4(44.11,185.74) v4(44.1,174.56) v4(44.11,123.12) v4(44.15,90.11) v4(44.09,43.87) v4(44.16,42.48) v4(44.26,192.98) v4(44.17,182.18) v4(44.2,151.08) v4(44.17,132.01) v4(44.19,120.08) v4(44.2,115.64) v4(44.19,85.79) v4(44.29,227.73) v4(44.34,146.75) v4(44.28,135.96) v4(44.35,104.85) v4(44.27,97.22) v4(44.34,74.54) v4(44.34,67.48) v4(44.27,64.55) v4(44.33,38.56) v4(44.32,30.26) v4(44.31,24.34) v4(44.37,226.36) v4(44.46,167.73) v4(44.41,148.94) v4(44.45,138.37) v4(44.37,127.56) v4(44.43,98.43) v4(44.39,84.42) v4(44.39,56.81) v4(44.37,53.49) v4(44.37,52.6) v4(44.39,50.11) v4(44.39,49.11) v4(44.39,48.11) v4(44.4,32.87) v4(44.4,32.18) v4(44.41,22.47) v4(44.49,203.73) v4(44.47,118.68) v4(44.51,102.39) v4(44.51,91.5) v4(44.51,72.46) v4(44.51,71.46) v4(44.51,70.46) v4(44.51,69.46) v4(44.51,68.46) v4(44.53,62.42) v4(44.5,28.73) v4(44.62,220.34) v4(44.65,186.63) v4(44.6,184.29) v4(44.65,147.53) v4(44.62,100.21) v4(44.64,34.58) v4(44.7,191.73) v4(44.74,160.34) v4(44.67,155.73) v4(44.69,142.36) v4(44.67,128.98) v4(44.76,112.73) v4(44.7,95.82) v4(44.73,40.1) v4(44.86,215.73) v4(44.85,214.36) v4(44.77,209.74) v4(44.85,194.37) v4(44.83,188.02) v4(44.77,183.58) v4(44.83,179.73) v4(44.78,139.78) v4(44.77,133.42) v4(44.84,107.88) v4(44.79,88.73) v4(44.84,79.44) v4(44.78,76.73) v4(44.77,36.8) v4(44.93,208.34) v4(44.88,178.36) v4(44.96,161.74) v4(44.96,134.55) v4(44.87,114.23) v4(44.94,111.36) v4(44.95,109.29) v4(44.91,87.36) v4(44.92,75.36) v4(44.96,73.2) v4(45.06,221.74) v4(44.99,190.36) v4(45,175.96) v4(45.02,154.36) v4(45,152.46) v4(45.06,151.07) v4(45.03,145.35) v4(45,143.73) v4(45.04,124.53) v4(44.97,123.11) v4(44.98,103.43) v4(45.06,100.98) v4(45.06,78.04) v4(44.98,63.85) v4(45.01,25.05) v4(45.11,185.74) v4(45.1,174.56) v4(45.08,132.01) v4(45.13,97.72) v4(45.15,90.11) v4(45.16,61.73) v4(45.09,57.52) v4(45.08,54.94) v4(45.16,42.48) v4(45.16,27.36) v4(45.12,23.17) v4(45.17,202.36) v4(45.26,192.98) v4(45.17,182.18) v4(45.2,166.36) v4(45.19,120.08) v4(45.2,115.64) v4(45.19,85.79) v4(45.2,29.78) v4(45.29,227.73) v4(45.34,146.75) v4(45.28,135.96) v4(45.35,104.85) v4(45.33,99.5) v4(45.27,97.22) v4(45.31,46.43) v4(45.31,45.64) v4(45.34,44.86) v4(45.34,33.88) v4(45.37,226.35) v4(45.46,167.74) v4(45.41,148.94) v4(45.45,138.37) v4(45.37,127.56) v4(45.39,84.42) v4(45.42,47.14) v4(45.45,39.4) v4(45.49,203.74) v4(45.47,118.68) v4(45.51,102.39) v4(45.51,91.5) v4(45.48,37.5) v4(45.5,28.74) v4(45.62,220.34) v4(45.65,192.05) v4(45.62,190.32) v4(45.64,189.51) v4(45.64,188.8) v4(45.62,188.04) v4(45.65,186.59) v4(45.64,185.22) v4(45.65,181.3) v4(45.65,180.3) v4(45.64,178.38) v4(45.65,177.41) v4(45.65,176.41) v4(45.65,173.72) v4(45.65,172.72) v4(45.65,171.72) v4(45.65,170.72) v4(45.65,169.72) v4(45.65,168.72) v4(45.65,165.46) v4(45.65,164.46) v4(45.65,163.46) v4(45.65,162.46) v4(45.65,159.92) v4(45.65,158.92) v4(45.65,157.92) v4(45.65,156.92) v4(45.65,155.92) v4(45.65,147.53) v4(45.65,95.49) v4(45.65,94.49) v4(45.65,93.49) v4(45.65,92.49) v4(45.62,89.61) v4(45.62,88.75) v4(45.65,86.68) v4(45.65,84.03) v4(45.65,83.03) v4(45.65,82.03) v4(45.65,81.03) v4(45.65,80.03) v4(45.64,77.83) v4(45.64,76.73) v4(45.62,74.98) v4(45.65,72.48) v4(45.65,71.48) v4(45.65,70.48) v4(45.65,69.48) v4(45.65,68.48) v4(45.65,67.48) v4(45.75,209.93) v4(45.67,161.75) v4(45.69,142.34) v4(45.67,128.98) v4(45.68,122.87) v4(45.76,112.75) v4(45.67,73.61) v4(45.7,63.15) v4(45.72,25.75) v4(45.86,215.75) v4(45.85,214.34) v4(45.85,194.41) v4(45.78,139.78) v4(45.77,133.42) v4(45.84,107.88) v4(45.85,61.09) v4(45.78,58.15) v4(45.78,56.15) v4(45.84,52.23) v4(45.78,51.23) v4(45.8,50.42) v4(45.8,49.63) v4(45.78,48.73) v4(45.78,44.1) v4(45.78,38.46) v4(45.78,32.98) v4(45.84,31.98) v4(45.82,23.88) v4(45.93,208.34) v4(45.96,134.55) v4(45.87,114.23) v4(45.94,111.34) v4(45.95,109.29) v4(45.89,54.16) v4(45.94,26.73) v4(46.06,221.74) v4(46.02,154.34) v4(46,152.46) v4(46.06,151.07) v4(46.03,145.35) v4(46,143.75) v4(46.04,124.52) v4(45.98,103.43) v4(45.99,100.6) v4(46.05,98.81) v4(45.99,41.93) v4(46.08,132.01) v4(46.13,66.9) v4(46.17,202.34) v4(46.19,120.08) v4(46.2,118.72) v4(46.2,115.64) v4(46.2,29.78) v4(46.34,146.75) v4(46.28,135.96) v4(46.28,122.07) v4(46.28,121.07) v4(46.35,104.85) v4(46.37,226.34) v4(46.46,210.64) v4(46.42,204.1) v4(46.41,149.01) v4(46.45,138.37) v4(46.37,127.56) v4(46.37,118.24) v4(46.41,62.45) v4(46.38,28.27) v4(46.52,227.74) v4(46.51,220.34) v4(46.56,216.46) v4(46.56,194.92) v4(46.48,102.12) v4(46.48,60.4) v4(46.49,58.86) v4(46.49,56.86) v4(46.55,51.52) v4(46.49,48.02) v4(46.56,46.48) v4(46.49,43.4) v4(46.55,31.27) v4(46.53,24.59) v4(46.65,147.53) v4(46.6,53.45) v4(46.73,208.94) v4(46.69,142.34) v4(46.67,128.98) v4(46.76,112.75) v4(46.7,99.89) v4(46.75,98.1) v4(46.73,66.3) v4(46.69,41.22) v4(46.78,214.71) v4(46.85,195.83) v4(46.77,154.99) v4(46.78,139.78) v4(46.77,133.42) v4(46.84,107.88) v4(46.84,59.59) v4(46.93,219.39) v4(46.93,218.39) v4(46.93,217.39) v4(46.93,213.52) v4(46.93,212.52) v4(46.93,211.52) v4(46.93,207.96) v4(46.93,206.96) v4(46.93,205.96) v4(46.93,204.96) v4(46.94,202.67) v4(46.93,201.69) v4(46.91,200.69) v4(46.93,199.82) v4(46.93,198.82) v4(46.93,197.82) v4(46.93,196.82) v4(46.96,134.55) v4(46.87,114.23) v4(46.94,111.34) v4(46.95,109.29) v4(46.93,40.25) v4(46.93,39.25) v4(46.93,38.25) v4(46.93,37.25) v4(47.06,221.74) v4(47.06,190.19) v4(47.06,189.19) v4(47.06,185.65) v4(47.06,184.65) v4(47.06,183.65) v4(47.06,182.65) v4(47.06,175.96) v4(47.06,174.56) v4(47.06,173.56) v4(47.06,172.56) v4(47.06,171.56) v4(47.06,166.34) v4(47.06,165.34) v4(47.06,164.34) v4(47.06,163.34) v4(47.06,156.95) v4(47.06,155.95) v4(47,152.46) v4(47.06,151.07) v4(47.03,145.35) v4(47,143.75) v4(47.04,124.52) v4(46.98,103.43) v4(47.06,95.82) v4(47.06,94.82) v4(47.06,93.82) v4(47.06,92.82) v4(47.06,91.82) v4(47.06,90.11) v4(47.06,84.39) v4(47.06,83.39) v4(47.06,82.39) v4(47.06,81.39) v4(47.06,80.39) v4(47.06,78.04) v4(47.06,77.04) v4(47.06,76.04) v4(47.06,75.04) v4(47.06,73.6) v4(47.06,72.6) v4(47.06,71.6) v4(47.06,70.6) v4(47.06,69.6) v4(47.06,68.6) v4(47.14,214.5) v4(47.09,188.42) v4(47.07,179.37) v4(47.07,158.72) v4(47.07,157.81) v4(47.12,149.72) v4(47.08,132.01) v4(47.08,117.53) v4(47.07,88.75) v4(47.07,86.56) v4(47.07,85.75) v4(47.13,61.75) v4(47.09,27.56) v4(47.22,177.21) v4(47.21,169.41) v4(47.21,168.41) v4(47.2,115.64) v4(47.18,101.41) v4(47.22,97.22) v4(47.19,87.34) v4(47.2,57.57) v4(47.26,50.82) v4(47.2,42.69) v4(47.2,29.78) v4(47.35,220.34) v4(47.36,191.15) v4(47.27,186.63) v4(47.34,146.75) v4(47.28,135.96) v4(47.35,104.87) v4(47.36,67.64) v4(47.3,52.74) v4(47.29,36.22) v4(47.37,226.34) v4(47.37,160.38) v4(47.45,138.37) v4(47.37,127.56) v4(47.41,99.19) v4(47.37,79.44) v4(47.4,65.61) v4(47.52,227.74) v4(47.49,215.41) v4(47.54,179.88) v4(47.48,148.08) v4(47.56,49.86) v4(47.56,48.86) v4(47.48,47.87) v4(47.56,45.54) v4(47.56,44.54) v4(47.54,31.18) v4(47.48,24.26) v4(47.6,178.84) v4(47.57,46.48) v4(47.76,194.09) v4(47.69,193.09) v4(47.69,192.09) v4(47.69,181.87) v4(47.69,180.87) v4(47.7,161.7) v4(47.69,142.34) v4(47.67,128.98) v4(47.7,122.85) v4(47.7,121.85) v4(47.7,120.85) v4(47.73,120.09) v4(47.76,112.75) v4(47.75,107.46) v4(47.85,215.21) v4(47.82,150.42) v4(47.78,139.78) v4(47.77,133.42) v4(47.78,116.83) v4(47.8,25.88) v4(47.91,170.12) v4(47.95,167.74) v4(47.96,134.55) v4(47.87,114.23) v4(47.94,111.34) v4(47.95,109.27) v4(47.89,100.7) v4(47.9,58.27) v4(47.9,41.98) v4(48.06,221.74) v4(48.05,189.37) v4(47.98,187.33) v4(48.06,175.96) v4(48.06,171.51) v4(48.06,163.26) v4(48,152.46) v4(48.03,145.35) v4(48,143.75) v4(48.04,124.52) v4(47.98,118.72) v4(48.06,105.57) v4(47.98,103.49) v4(48.01,91.5) v4(48.05,74.86) v4(48.02,72.91) v4(48.06,66.93) v4(47.98,65) v4(48.06,43.67) v4(47.99,35.45) v4(47.98,28.01) v4(48.13,181.43) v4(48.13,180.31) v4(48.16,178.49) v4(48.16,158.32) v4(48.08,132.01) v4(48.11,98.48) v4(48.09,88.72) v4(48.16,85.78) v4(48.2,216.12) v4(48.19,176.95) v4(48.19,174.51) v4(48.19,173.51) v4(48.19,172.51) v4(48.19,168.71) v4(48.19,166.25) v4(48.19,165.25) v4(48.19,164.25) v4(48.18,161.77) v4(48.18,159.66) v4(48.18,157.4) v4(48.19,156.45) v4(48.19,155.45) v4(48.19,154.45) v4(48.19,153.45) v4(48.18,151.1) v4(48.19,148.79) v4(48.2,115.64) v4(48.19,106.56) v4(48.19,97.48) v4(48.19,95.49) v4(48.19,94.49) v4(48.19,93.49) v4(48.19,92.49) v4(48.19,90.05) v4(48.19,87.34) v4(48.18,86.54) v4(48.19,84.01) v4(48.19,83.01) v4(48.19,82.01) v4(48.19,81.01) v4(48.19,80.01) v4(48.19,77.85) v4(48.19,76.85) v4(48.19,75.85) v4(48.19,71.92) v4(48.19,70.92) v4(48.2,69.92) v4(48.2,68.92) v4(48.2,67.92) v4(48.2,63.9) v4(48.2,62.9) v4(48.2,61.9) v4(48.2,60.9) v4(48.2,59.9) v4(48.2,58.9) v4(48.2,57.9) v4(48.2,56.9) v4(48.2,55.9) v4(48.2,54.9) v4(48.2,53.9) v4(48.21,52.83) v4(48.23,51.74) v4(48.17,29.58) v4(48.18,25.53) v4(48.32,219.11) v4(48.32,218.11) v4(48.32,217.11) v4(48.32,212.79) v4(48.32,211.79) v4(48.31,211.02) v4(48.31,210.26) v4(48.32,207.43) v4(48.32,206.43) v4(48.32,205.43) v4(48.32,204.43) v4(48.32,203.43) v4(48.31,202.59) v4(48.3,201.78) v4(48.32,199.17) v4(48.32,198.17) v4(48.32,195.91) v4(48.32,194.91) v4(48.34,146.75) v4(48.28,135.96) v4(48.32,41.07) v4(48.32,40.07) v4(48.32,39.07) v4(48.32,38.07) v4(48.34,23.76) v4(48.37,226.34) v4(48.41,213.79) v4(48.45,208.42) v4(48.45,138.37) v4(48.37,127.56) v4(48.4,122.7) v4(48.37,37.08) v4(48.44,26.49) v4(48.52,227.74) v4(48.56,215.91) v4(48.55,118.06) v4(48.56,31.77) v4(48.58,200.04) v4(48.65,108.56) v4(48.6,100) v4(48.75,190.08) v4(48.69,188.03) v4(48.69,142.34) v4(48.67,129.03) v4(48.7,120.8) v4(48.76,112.75) v4(48.68,104.2) v4(48.76,42.96) v4(48.7,34.74) v4(48.69,28.72) v4(48.83,196.07) v4(48.83,195.07) v4(48.83,194.07) v4(48.83,193.07) v4(48.83,192.07) v4(48.83,191.07) v4(48.83,184.39) v4(48.83,183.39) v4(48.85,182.39) v4(48.77,144.39) v4(48.78,139.78) v4(48.77,133.42) v4(48.83,121.8) v4(48.77,116.64) v4(48.91,219.93) v4(48.91,197.56) v4(48.9,149.49) v4(48.96,134.55) v4(48.95,124.12) v4(48.87,114.23) v4(48.94,111.34) v4(48.92,49.83) v4(48.92,48.84) v4(48.95,47.85) v4(48.96,45.65) v4(49.06,221.74) v4(49.05,202.44) v4(49.03,145.35) v4(49,131.62) v4(49.04,44.66) v4(49.11,214.49) v4(49.16,209.13) v4(49.1,185.35) v4(49.07,36.37) v4(49.14,27.2) v4(49.11,25.16) v4(49.26,216.62) v4(49.2,115.64) v4(49.2,30.48) v4(49.29,210.53) v4(49.34,146.75) v4(49.28,135.96) v4(49.36,107.85) v4(49.3,99.29) v4(49.27,32.47) v4(49.34,23.76) v4(49.37,226.34) v4(49.39,188.74) v4(49.41,143.03) v4(49.45,138.37) v4(49.43,133.55) v4(49.37,129.74) v4(49.37,127.56) v4(49.41,118.68) v4(49.39,104.9) v4(49.41,34.03) v4(49.52,227.74) v4(49.47,200.94) v4(49.47,130.73) v4(49.55,118.06) v4(49.56,49.17) v4(49.53,46.47) v4(49.47,42.25) v4(49.61,180.21) v4(49.59,178.83) v4(49.6,176.6) v4(49.61,175.95) v4(49.6,174.56) v4(49.6,173.56) v4(49.6,172.56) v4(49.6,171.56) v4(49.6,170.12) v4(49.6,169.12) v4(49.6,168.12) v4(49.6,166.31) v4(49.6,165.31) v4(49.6,164.31) v4(49.6,163.31) v4(49.63,161.87) v4(49.6,160.94) v4(49.58,158.32) v4(49.6,157.42) v4(49.6,156.42) v4(49.6,155.42) v4(49.6,154.42) v4(49.6,153.42) v4(49.61,152.45) v4(49.63,151.08) v4(49.6,150.2) v4(49.66,123.41) v4(49.6,106.88) v4(49.6,105.88) v4(49.6,98.33) v4(49.6,95.82) v4(49.6,94.82) v4(49.6,93.82) v4(49.6,92.82) v4(49.6,91.82) v4(49.61,90.12) v4(49.6,87.62) v4(49.6,86.62) v4(49.61,85.75) v4(49.6,84.39) v4(49.6,83.39) v4(49.6,82.39) v4(49.6,81.39) v4(49.6,80.39) v4(49.6,79.39) v4(49.6,78.04) v4(49.6,77.04) v4(49.6,76.04) v4(49.6,75.04) v4(49.6,74.04) v4(49.6,73.04) v4(49.6,72.04) v4(49.6,71.04) v4(49.59,67.59) v4(49.59,66.47) v4(49.59,65.05) v4(49.59,64.05) v4(49.59,63.05) v4(49.59,62.05) v4(49.59,61.05) v4(49.59,60.05) v4(49.59,59.05) v4(49.59,58.05) v4(49.59,57.05) v4(49.59,56.05) v4(49.59,55.05) v4(49.59,54.05) v4(49.59,51.09) v4(49.68,134.54) v4(49.76,112.75) v4(49.75,43.95) v4(49.82,215.2) v4(49.81,186.05) v4(49.78,145.36) v4(49.78,139.78) v4(49.77,116.64) v4(49.82,68.56) v4(49.85,31.13) v4(49.85,29.88) v4(49.87,220.21) v4(49.91,203.33) v4(49.88,197.76) v4(49.94,181.48) v4(49.91,160.02) v4(49.96,134.09) v4(49.91,120.07) v4(49.87,114.23) v4(49.89,111.03) v4(49.96,88.54) v4(49.89,47.87) v4(49.91,27.84) v4(50.06,221.74) v4(49.97,217.33) v4(49.99,52.01) v4(50.1,212.11) v4(50.1,211.11) v4(50.1,208.75) v4(50.1,207.75) v4(50.1,206.75) v4(50.1,205.75) v4(50.1,204.75) v4(50.11,201.57) v4(50.1,200.74) v4(50.1,199.74) v4(50.1,198.74) v4(50.1,189.45) v4(50.1,188.01) v4(50.1,187.01) v4(50.13,180.63) v4(50.11,179.37) v4(50.15,177.43) v4(50.12,143.74) v4(50.16,97.51) v4(50.15,65.05) v4(50.07,36.45) v4(50.11,33.32) v4(50.11,25.16) v4(50.17,195.09) v4(50.17,194.09) v4(50.17,193.09) v4(50.17,192.09) v4(50.17,191.09) v4(50.17,190.09) v4(50.17,184.35) v4(50.19,183.54) v4(50.23,122.59) v4(50.23,121.59) v4(50.23,120.59) v4(50.2,115.64) v4(50.17,70.22) v4(50.18,41.55) v4(50.34,213.07) v4(50.34,146.75) v4(50.28,135.96) v4(50.35,53.4) v4(50.3,50.38) v4(50.34,23.76) v4(50.37,226.34) v4(50.39,165.81) v4(50.45,163.83) v4(50.45,138.37) v4(50.39,134.54) v4(50.37,127.56) v4(50.4,118.58) v4(50.45,48.82) v4(50.46,43.24) v4(50.42,30.45) v4(50.52,227.74) v4(50.51,167.7) v4(50.52,128.98) v4(50.54,67.87) v4(50.53,46.47) v4(50.5,34.98) v4(50.51,31.77) v4(50.65,215.21) v4(50.6,171.51) v4(50.57,153.16) v4(50.57,132) v4(50.59,113.53) v4(50.6,110.32) v4(50.57,80.13) v4(50.59,66.47) v4(50.62,27.13) v4(50.68,218.04) v4(50.73,176.89) v4(50.75,175.95) v4(50.73,174.51) v4(50.73,173.51) v4(50.73,172.51) v4(50.73,169.68) v4(50.73,168.68) v4(50.73,164.8) v4(50.7,162.1) v4(50.72,161.19) v4(50.75,160.25) v4(50.7,159.23) v4(50.72,157.25) v4(50.73,156.14) v4(50.73,155.14) v4(50.73,154.14) v4(50.72,151.36) v4(50.72,150.52) v4(50.73,149.67) v4(50.73,148.67) v4(50.73,147.67) v4(50.75,144.35) v4(50.74,142.95) v4(50.74,141.95) v4(50.72,140.64) v4(50.75,137.62) v4(50.75,136.58) v4(50.73,123.46) v4(50.72,122.06) v4(50.72,121.06) v4(50.72,120.09) v4(50.73,116.91) v4(50.74,112.54) v4(50.73,109.33) v4(50.73,108.33) v4(50.73,107.33) v4(50.73,106.33) v4(50.73,105.33) v4(50.73,104.33) v4(50.73,103.33) v4(50.73,102.33) v4(50.73,101.33) v4(50.73,100.33) v4(50.73,99.33) v4(50.73,98.33) v4(50.73,95.55) v4(50.73,94.55) v4(50.73,93.55) v4(50.73,92.55) v4(50.72,91.34) v4(50.72,89.28) v4(50.72,88.47) v4(50.73,87.61) v4(50.73,86.61) v4(50.72,85.78) v4(50.73,84.12) v4(50.73,83.12) v4(50.73,82.12) v4(50.73,81.12) v4(50.73,77.9) v4(50.73,76.9) v4(50.73,75.9) v4(50.73,74.9) v4(50.73,73.9) v4(50.73,72.9) v4(50.86,178.14) v4(50.86,130.73) v4(50.86,129.73) v4(50.78,37.16) v4(50.87,220.21) v4(50.9,131.5) v4(50.91,71.91) v4(50.87,69.51) v4(50.89,47.87) v4(50.88,40.84) v4(51.06,221.74) v4(51.04,213.78) v4(50.99,52.01) v4(51.15,65.05) v4(51.16,42.53) v4(51.16,35.59) v4(51.13,34.32) v4(51.1,32.36) v4(51.08,31.09) v4(51.11,25.16) v4(51.22,216.6) v4(51.21,133.43) v4(51.2,115.64) v4(51.35,53.4) v4(51.29,50.23) v4(51.29,28.43) v4(51.34,23.76) v4(51.37,226.34) v4(51.46,185.37) v4(51.37,127.56) v4(51.42,124.18) v4(51.44,117.62) v4(51.45,48.82) v4(51.37,39.96) v4(51.37,38.96) v4(51.37,37.96) v4(51.37,29.43) v4(51.52,227.74) v4(51.56,218.5) v4(51.5,215.2) v4(51.47,212.23) v4(51.5,211.19) v4(51.5,209.13) v4(51.5,208.13) v4(51.5,207.13) v4(51.5,206.13) v4(51.5,205.13) v4(51.5,202.1) v4(51.5,201.1) v4(51.5,200.1) v4(51.5,199.1) v4(51.51,198.09) v4(51.5,196.14) v4(51.5,195.14) v4(51.5,194.14) v4(51.5,193.14) v4(51.5,192.14) v4(51.5,191.14) v4(51.5,190.14) v4(51.5,189.14) v4(51.5,188.14) v4(51.5,187.14) v4(51.49,184.43) v4(51.49,183.59) v4(51.51,182.14) v4(51.49,180.77) v4(51.5,179.91) v4(51.5,178.91) v4(51.52,128.98) v4(51.54,67.87) v4(51.53,46.47) v4(51.65,203.09) v4(51.66,132.01) v4(51.62,71.21) v4(51.59,66.47) v4(51.6,26.96) v4(51.73,219.7) v4(51.71,31.72) v4(51.85,145.35) v4(51.82,114.22) v4(51.85,69.29) v4(51.84,36.27) v4(51.84,35.05) v4(51.89,217.09) v4(51.92,197.56) v4(51.89,47.87) v4(51.87,41.83) v4(52.05,221.6) v4(52.05,214.29) v4(51.99,52.01) v4(52.13,179.32) v4(52.15,176.91) v4(52.15,175.95) v4(52.14,174.56) v4(52.14,173.56) v4(52.14,172.56) v4(52.14,171.56) v4(52.14,170.12) v4(52.14,169.12) v4(52.14,168.12) v4(52.14,166.31) v4(52.14,165.31) v4(52.14,164.31) v4(52.14,163.31) v4(52.14,162.31) v4(52.14,161.31) v4(52.14,160.31) v4(52.14,159.31) v4(52.14,158.31) v4(52.14,157.31) v4(52.14,156.31) v4(52.14,155.31) v4(52.14,154.31) v4(52.14,153.31) v4(52.14,152.31) v4(52.14,151.31) v4(52.14,150.31) v4(52.14,149.31) v4(52.14,148.31) v4(52.14,147.31) v4(52.14,146.31) v4(52.13,144.39) v4(52.13,143.39) v4(52.13,142.39) v4(52.13,141.39) v4(52.13,139.63) v4(52.13,138.63) v4(52.13,137.78) v4(52.13,136.86) v4(52.13,135.97) v4(52.12,134.57) v4(52.13,124.88) v4(52.14,122.06) v4(52.14,121.06) v4(52.15,118.69) v4(52.13,112.95) v4(52.13,111.95) v4(52.13,110.95) v4(52.14,109.95) v4(52.14,108.95) v4(52.14,107.95) v4(52.14,106.95) v4(52.14,105.95) v4(52.14,104.95) v4(52.14,103.95) v4(52.14,102.95) v4(52.14,101.95) v4(52.14,100.95) v4(52.14,99.95) v4(52.14,98.95) v4(52.14,97.95) v4(52.14,96.95) v4(52.14,95.95) v4(52.14,94.95) v4(52.14,93.95) v4(52.14,92.95) v4(52.14,91.95) v4(52.14,90.95) v4(52.14,89.95) v4(52.14,88.95) v4(52.14,87.95) v4(52.14,86.95) v4(52.14,85.95) v4(52.14,84.39) v4(52.14,83.39) v4(52.14,82.39) v4(52.14,81.39) v4(52.14,80.39) v4(52.14,78.04) v4(52.14,77.04) v4(52.14,76.04) v4(52.14,75.04) v4(52.14,74.04) v4(52.14,73.04) v4(52.15,65.05) v4(52.12,33.32) v4(52.08,30.14) v4(52.11,25.16) v4(52.22,216.6) v4(52.18,212.94) v4(52.24,210.53) v4(52.2,115.64) v4(52.36,203.8) v4(52.35,129.53) v4(52.29,123.05) v4(52.35,120.08) v4(52.33,70.5) v4(52.35,53.4) v4(52.29,50.23) v4(52.29,28.36) v4(52.34,23.76) v4(52.37,226.34) v4(52.44,218.99) v4(52.42,186.76) v4(52.37,185.36) v4(52.46,183.59) v4(52.41,133.42) v4(52.37,127.56) v4(52.45,79.44) v4(52.45,48.82) v4(52.52,227.74) v4(52.5,215.12) v4(52.5,205.19) v4(52.55,196.14) v4(52.55,182.17) v4(52.47,177.66) v4(52.54,67.87) v4(52.53,46.47) v4(52.48,36.93) v4(52.64,209.13) v4(52.63,180.7) v4(52.66,132.01) v4(52.65,72.18) v4(52.59,66.47) v4(52.58,41.12) v4(52.63,35.81) v4(52.6,26.96) v4(52.76,39.17) v4(52.7,33.93) v4(52.86,118.26) v4(52.85,69.29) v4(52.77,40.14) v4(52.93,197.57) v4(52.88,165.84) v4(52.88,77.61) v4(52.89,47.87) v4(52.89,32.92) v4(53.05,221.6) v4(52.98,218.47) v4(53.05,214.29) v4(53.02,179.78) v4(52.98,174) v4(52.99,172.09) v4(53.03,167.66) v4(53.05,130.24) v4(53,123.75) v4(53.03,86.41) v4(52.99,52.01) v4(53.06,50.87) v4(53.05,30.39) v4(53.16,212.93) v4(53.16,203.81) v4(53.13,187.47) v4(53.07,141.04) v4(53.09,125.17) v4(53.15,65.05) v4(53.09,54.08) v4(53.11,25.16) v4(53.2,220.21) v4(53.19,217.09) v4(53.2,216.4) v4(53.24,210.53) v4(53.18,178.36) v4(53.26,136.86) v4(53.26,135.97) v4(53.2,115.64) v4(53.28,195.46) v4(53.28,194.46) v4(53.28,193.46) v4(53.28,192.46) v4(53.28,191.46) v4(53.28,190.46) v4(53.28,189.46) v4(53.28,188.46) v4(53.31,185.68) v4(53.28,176.84) v4(53.29,175.62) v4(53.28,173.05) v4(53.29,170.41) v4(53.29,169.52) v4(53.28,168.63) v4(53.28,165.02) v4(53.28,164.02) v4(53.28,163.02) v4(53.28,162.02) v4(53.28,161.02) v4(53.28,160.02) v4(53.28,159.02) v4(53.28,158.02) v4(53.28,157.02) v4(53.28,156.02) v4(53.28,155.02) v4(53.28,154.02) v4(53.28,153.02) v4(53.28,152.02) v4(53.28,151.02) v4(53.28,150.02) v4(53.28,149.02) v4(53.28,148.02) v4(53.28,147.02) v4(53.28,146.02) v4(53.28,145.02) v4(53.28,144.02) v4(53.28,143.02) v4(53.28,142.02) v4(53.29,139.59) v4(53.29,138.59) v4(53.29,137.74) v4(53.31,134.57) v4(53.29,133.53) v4(53.28,131.22) v4(53.28,127.15) v4(53.28,126.15) v4(53.28,122.46) v4(53.28,121.46) v4(53.28,120.46) v4(53.29,119.76) v4(53.28,117.64) v4(53.28,116.64) v4(53.29,114.22) v4(53.28,113.38) v4(53.28,112.38) v4(53.28,111.38) v4(53.28,110.38) v4(53.28,109.38) v4(53.28,108.38) v4(53.28,107.38) v4(53.28,106.38) v4(53.28,105.38) v4(53.28,104.38) v4(53.28,103.38) v4(53.28,102.38) v4(53.28,101.38) v4(53.28,100.38) v4(53.28,99.38) v4(53.28,98.38) v4(53.28,97.38) v4(53.28,96.38) v4(53.28,95.38) v4(53.28,94.38) v4(53.28,93.38) v4(53.28,92.38) v4(53.28,91.38) v4(53.28,90.38) v4(53.28,89.38) v4(53.28,88.38) v4(53.28,87.38) v4(53.28,83.99) v4(53.28,82.99) v4(53.28,81.99) v4(53.28,80.99) v4(53.28,79.99) v4(53.29,79.1) v4(53.28,76.96) v4(53.28,75.96) v4(53.28,74.96) v4(53.28,73.96) v4(53.28,72.96) v4(53.28,71.96) v4(53.28,70.19) v4(53.28,67.2) v4(53.28,64.06) v4(53.28,63.06) v4(53.28,62.06) v4(53.28,61.06) v4(53.28,60.06) v4(53.28,59.06) v4(53.28,58.06) v4(53.28,57.06) v4(53.28,56.06) v4(53.28,55.06) v4(53.29,28.36) v4(53.34,23.76) v4(53.37,226.34) v4(53.46,183.59) v4(53.42,36.63) v4(53.37,34.59) v4(53.52,227.74) v4(53.5,205.19) v4(53.49,49.35) v4(53.53,46.47) v4(53.54,37.94) v4(53.64,209.13) v4(53.64,182.17) v4(53.6,33.63) v4(53.6,26.96) v4(53.73,31.79) v4(53.84,181.47) v4(53.77,40.15) v4(53.9,219.5) v4(53.9,215.69) v4(53.95,197.56) v4(53.89,47.87) v4(54.05,221.6) v4(54,203.8) v4(54.02,186.38) v4(54.04,35.27) v4(54.05,30.39) v4(54.13,49.96) v4(54.11,25.16) v4(54.23,212.89) v4(54.24,210.53) v4(54.24,38.65) v4(54.3,34.34) v4(54.29,28.36) v4(54.34,23.76) v4(54.37,226.34) v4(54.46,183.59) v4(54.52,227.74) v4(54.5,216.92) v4(54.52,208.65) v4(54.5,205.19) v4(54.54,180.76) v4(54.53,46.47) v4(54.48,40.86) v4(54.65,220.21) v4(54.61,218.79) v4(54.61,214.98) v4(54.66,70.18) v4(54.66,66.47) v4(54.59,32.64) v4(54.6,26.96) v4(54.67,196.14) v4(54.67,195.14) v4(54.67,194.14) v4(54.67,193.14) v4(54.67,192.14) v4(54.67,191.14) v4(54.67,190.14) v4(54.67,189.14) v4(54.67,188.14) v4(54.67,187.14) v4(54.74,179.78) v4(54.67,178.36) v4(54.67,177.36) v4(54.67,176.36) v4(54.67,175.36) v4(54.67,174.36) v4(54.67,173.36) v4(54.67,172.36) v4(54.67,171.36) v4(54.67,170.36) v4(54.67,169.36) v4(54.67,168.36) v4(54.67,167.36) v4(54.67,166.36) v4(54.67,165.36) v4(54.67,164.36) v4(54.67,163.36) v4(54.67,162.36) v4(54.67,161.36) v4(54.67,160.36) v4(54.67,159.36) v4(54.67,158.36) v4(54.67,157.36) v4(54.67,156.36) v4(54.67,155.36) v4(54.67,154.36) v4(54.67,153.36) v4(54.67,152.36) v4(54.67,151.36) v4(54.67,150.36) v4(54.67,149.36) v4(54.67,148.36) v4(54.67,147.36) v4(54.67,146.36) v4(54.67,145.36) v4(54.67,144.36) v4(54.67,143.36) v4(54.67,142.36) v4(54.67,141.36) v4(54.67,139.63) v4(54.67,138.63) v4(54.67,137.63) v4(54.67,136.63) v4(54.7,135.99) v4(54.67,134.55) v4(54.67,133.55) v4(54.67,132.01) v4(54.67,131.01) v4(54.67,130.01) v4(54.67,129.01) v4(54.67,127.56) v4(54.67,126.56) v4(54.67,125.56) v4(54.67,122.28) v4(54.67,121.28) v4(54.67,120.28) v4(54.67,119.28) v4(54.67,118.28) v4(54.67,117.28) v4(54.67,116) v4(54.67,114.23) v4(54.67,113.23) v4(54.67,112.23) v4(54.67,111.23) v4(54.67,110.23) v4(54.67,109.23) v4(54.67,108.23) v4(54.67,107.23) v4(54.67,106.23) v4(54.67,105.23) v4(54.67,104.23) v4(54.67,103.23) v4(54.67,102.23) v4(54.67,101.23) v4(54.67,100.23) v4(54.67,99.23) v4(54.67,98.23) v4(54.67,97.23) v4(54.67,96.23) v4(54.67,95.23) v4(54.67,94.23) v4(54.67,93.23) v4(54.67,92.23) v4(54.67,91.23) v4(54.67,90.23) v4(54.67,89.23) v4(54.67,88.23) v4(54.67,87.23) v4(54.67,86.23) v4(54.67,85.23) v4(54.67,84.23) v4(54.67,83.23) v4(54.67,82.23) v4(54.67,81.23) v4(54.67,80.23) v4(54.67,79.23) v4(54.67,78.23) v4(54.67,77.23) v4(54.67,76.23) v4(54.67,75.23) v4(54.67,74.23) v4(54.67,73.23) v4(54.67,72.23) v4(54.67,69.29) v4(54.67,67.87) v4(54.67,67.19) v4(54.67,64.65) v4(54.67,63.65) v4(54.67,62.65) v4(54.67,61.65) v4(54.67,60.65) v4(54.67,59.65) v4(54.67,58.65) v4(54.67,57.65) v4(54.67,56.65) v4(54.67,55.65) v4(54.67,54.65) v4(54.67,53.65) v4(54.67,52.65) v4(54.67,51.65) v4(54.67,50.65) v4(54.74,35.98) v4(54.73,31.79) v4(54.8,123.27) v4(54.95,197.56) v4(54.9,182.17) v4(54.89,47.87) v4(54.95,39.36) v4(54.96,38.17) v4(55.05,221.6) v4(55,203.75) v4(55.01,35.04) v4(55.05,30.39) v4(55.14,212.48) v4(55.11,210.03) v4(55.11,25.16) v4(55.21,216.22) v4(55.22,207.95) v4(55.18,41.57) v4(55.33,214.29) v4(55.29,124.78) v4(55.29,33.35) v4(55.29,28.36) v4(55.34,23.76) v4(55.37,226.34) v4(55.46,183.59) v4(55.38,116.71) v4(55.46,71.61) v4(55.45,36.68) v4(55.52,227.74) v4(55.5,205.19) v4(55.51,122.56) v4(55.55,48.44) v4(55.53,46.47) v4(55.64,220.21) v4(55.57,218.5) v4(55.6,140.98) v4(55.66,38.87) v4(55.6,26.96) v4(55.71,203.04) v4(55.74,179.78) v4(55.67,136.68) v4(55.67,133.42) v4(55.67,128.98) v4(55.72,35.75) v4(55.73,31.79) v4(55.82,211.75) v4(55.82,210.75) v4(55.83,209.3) v4(55.82,207.14) v4(55.82,206.14) v4(55.82,202.05) v4(55.82,201.05) v4(55.82,200.05) v4(55.82,199.05) v4(55.83,198.3) v4(55.8,197.56) v4(55.8,196.14) v4(55.8,195.35) v4(55.82,194.52) v4(55.82,193.52) v4(55.82,192.52) v4(55.82,191.52) v4(55.82,190.52) v4(55.82,189.52) v4(55.82,188.52) v4(55.82,187.52) v4(55.82,186.52) v4(55.82,185.52) v4(55.82,184.52) v4(55.82,181.77) v4(55.82,180.77) v4(55.82,177.96) v4(55.82,176.96) v4(55.82,175.96) v4(55.82,174.96) v4(55.82,173.96) v4(55.82,172.96) v4(55.82,171.96) v4(55.82,170.96) v4(55.82,169.96) v4(55.82,168.96) v4(55.82,167.96) v4(55.82,166.96) v4(55.82,165.96) v4(55.82,164.96) v4(55.82,163.96) v4(55.82,162.96) v4(55.82,161.96) v4(55.82,160.96) v4(55.82,159.96) v4(55.82,158.96) v4(55.82,157.96) v4(55.82,156.96) v4(55.82,155.96) v4(55.82,154.96) v4(55.82,153.96) v4(55.82,152.96) v4(55.82,151.96) v4(55.82,150.96) v4(55.82,149.96) v4(55.82,148.96) v4(55.82,147.96) v4(55.82,146.96) v4(55.82,145.96) v4(55.82,144.96) v4(55.82,143.96) v4(55.82,142.96) v4(55.82,141.96) v4(55.81,138.67) v4(55.81,137.67) v4(55.82,134.41) v4(55.82,131.97) v4(55.82,130.97) v4(55.82,129.97) v4(55.82,127.58) v4(55.82,126.63) v4(55.82,125.63) v4(55.83,124.28) v4(55.81,121.61) v4(55.81,120.61) v4(55.81,119.61) v4(55.81,118.61) v4(55.81,117.61) v4(55.82,115.14) v4(55.83,114.33) v4(55.82,113.54) v4(55.82,112.54) v4(55.82,111.54) v4(55.82,110.54) v4(55.82,109.54) v4(55.82,108.54) v4(55.82,107.54) v4(55.82,106.54) v4(55.82,105.54) v4(55.82,104.54) v4(55.82,103.54) v4(55.82,102.54) v4(55.82,101.54) v4(55.82,100.54) v4(55.82,99.54) v4(55.82,98.54) v4(55.82,97.54) v4(55.82,96.54) v4(55.82,95.54) v4(55.82,94.54) v4(55.82,93.54) v4(55.82,92.54) v4(55.82,91.54) v4(55.82,90.54) v4(55.82,89.54) v4(55.82,88.54) v4(55.82,87.54) v4(55.82,86.54) v4(55.82,85.54) v4(55.82,84.54) v4(55.82,83.54) v4(55.82,82.54) v4(55.82,81.54) v4(55.82,80.54) v4(55.82,79.54) v4(55.82,78.54) v4(55.82,77.54) v4(55.82,76.54) v4(55.82,75.54) v4(55.82,74.54) v4(55.82,73.54) v4(55.82,72.54) v4(55.83,70.18) v4(55.83,69.32) v4(55.83,67.87) v4(55.83,67.18) v4(55.85,66.47) v4(55.82,64.46) v4(55.82,63.46) v4(55.82,62.46) v4(55.82,61.46) v4(55.82,60.46) v4(55.82,59.46) v4(55.82,58.46) v4(55.82,57.46) v4(55.82,56.46) v4(55.82,55.46) v4(55.82,54.46) v4(55.82,53.46) v4(55.82,52.46) v4(55.82,51.46) v4(55.82,50.46) v4(55.82,49.46) v4(55.82,45.34) v4(55.82,44.34) v4(55.82,43.34) v4(55.82,42.34) v4(55.83,40.23) v4(55.92,215.51) v4(56.05,221.6) v4(56,34.06) v4(56.05,30.39) v4(56.13,213.69) v4(56.16,37.39) v4(56.11,25.16) v4(56.3,217.11) v4(56.29,28.36) v4(56.34,23.76) v4(56.37,226.34) v4(56.42,36.46) v4(56.52,227.74) v4(56.64,220.21) v4(56.57,218.5) v4(56.63,214.8) v4(56.6,26.96) v4(56.71,34.77) v4(56.73,31.79) v4(56.84,212.98) v4(56.86,38.1) v4(57.05,221.6) v4(57,216.4) v4(57.05,30.39) v4(57.13,37.16) v4(57.11,25.16) v4(57.2,210.44) v4(57.21,209.04) v4(57.21,207.93) v4(57.18,205.99) v4(57.21,204.56) v4(57.21,203.56) v4(57.21,202.56) v4(57.21,201.56) v4(57.21,200.56) v4(57.21,199.56) v4(57.21,198.56) v4(57.21,197.56) v4(57.21,196.14) v4(57.21,195.14) v4(57.21,194.14) v4(57.21,193.14) v4(57.21,192.14) v4(57.21,191.14) v4(57.21,190.14) v4(57.21,189.14) v4(57.21,188.14) v4(57.21,187.14) v4(57.21,186.14) v4(57.21,185.14) v4(57.21,184.14) v4(57.21,182.17) v4(57.21,181.17) v4(57.21,180.17) v4(57.21,178.36) v4(57.21,177.36) v4(57.21,176.36) v4(57.21,175.36) v4(57.21,174.36) v4(57.21,173.36) v4(57.21,172.36) v4(57.21,171.36) v4(57.21,170.36) v4(57.21,169.36) v4(57.21,168.36) v4(57.21,167.36) v4(57.21,166.36) v4(57.21,165.36) v4(57.21,164.36) v4(57.21,163.36) v4(57.21,162.36) v4(57.21,161.36) v4(57.21,160.36) v4(57.21,159.36) v4(57.21,158.36) v4(57.21,157.36) v4(57.21,156.36) v4(57.21,155.36) v4(57.21,154.36) v4(57.21,153.36) v4(57.21,152.36) v4(57.21,151.36) v4(57.21,150.36) v4(57.21,149.36) v4(57.21,148.36) v4(57.21,147.36) v4(57.21,146.36) v4(57.21,145.36) v4(57.21,144.36) v4(57.21,143.36) v4(57.21,142.36) v4(57.21,141.36) v4(57.21,140.36) v4(57.22,139.36) v4(57.22,138.36) v4(57.22,137.36) v4(57.22,136.36) v4(57.21,135.36) v4(57.21,134.36) v4(57.2,133.43) v4(57.21,132.01) v4(57.21,131.01) v4(57.21,130.01) v4(57.21,129.01) v4(57.21,127.56) v4(57.21,126.56) v4(57.21,125.56) v4(57.21,124.56) v4(57.21,123.56) v4(57.22,122.56) v4(57.22,121.56) v4(57.22,120.56) v4(57.22,119.56) v4(57.22,118.56) v4(57.22,117.56) v4(57.22,116.56) v4(57.21,115.56) v4(57.21,114.56) v4(57.21,113.56) v4(57.21,112.56) v4(57.21,111.56) v4(57.21,110.56) v4(57.21,109.56) v4(57.21,108.56) v4(57.21,107.56) v4(57.21,106.56) v4(57.21,105.56) v4(57.21,104.56) v4(57.21,103.56) v4(57.21,102.56) v4(57.21,101.56) v4(57.21,100.56) v4(57.21,99.56) v4(57.21,98.56) v4(57.21,97.56) v4(57.21,96.56) v4(57.21,95.56) v4(57.21,94.56) v4(57.21,93.56) v4(57.21,92.56) v4(57.21,91.56) v4(57.21,90.56) v4(57.21,89.56) v4(57.21,88.56) v4(57.21,87.56) v4(57.21,86.56) v4(57.21,85.56) v4(57.21,84.56) v4(57.21,83.56) v4(57.21,82.56) v4(57.21,81.56) v4(57.21,80.56) v4(57.21,79.56) v4(57.21,78.56) v4(57.21,77.56) v4(57.21,76.56) v4(57.21,75.56) v4(57.21,74.56) v4(57.21,73.56) v4(57.21,72.56) v4(57.2,71.65) v4(57.23,70.18) v4(57.21,69.29) v4(57.21,67.87) v4(57.21,67.19) v4(57.2,66.47) v4(57.21,65.05) v4(57.21,64.05) v4(57.21,63.05) v4(57.21,62.05) v4(57.21,61.05) v4(57.21,60.05) v4(57.21,59.05) v4(57.21,58.05) v4(57.21,57.05) v4(57.21,56.05) v4(57.21,55.05) v4(57.21,54.05) v4(57.21,53.05) v4(57.21,52.05) v4(57.21,51.05) v4(57.21,50.05) v4(57.21,49.05) v4(57.21,48.05) v4(57.21,47.05) v4(57.21,46.05) v4(57.21,45.05) v4(57.21,44.05) v4(57.21,41.62) v4(57.2,40.39) v4(57.33,214.09) v4(57.29,28.36) v4(57.34,23.76) v4(57.37,226.34) v4(57.42,212.17) v4(57.42,35.47) v4(57.52,227.74) v4(57.64,220.21) v4(57.57,218.5) v4(57.57,38.8) v4(57.6,26.96) v4(57.76,216.85) v4(57.71,215.69) v4(57.69,32.06) v4(57.78,209.8) v4(57.8,205.38) v4(57.81,42.21) v4(57.81,41) v4(57.84,37.87) v4(57.92,207.23) v4(58.05,221.6) v4(58.04,213.39) v4(58.05,183.59) v4(58.04,179.6) v4(58.05,30.44) v4(58.13,211.46) v4(58.11,44.49) v4(58.11,25.16) v4(58.21,197.56) v4(58.18,134.11) v4(58.2,128.85) v4(58.21,72.55) v4(58.21,69.29) v4(58.36,216.05) v4(58.36,215.05) v4(58.36,212.44) v4(58.36,209.13) v4(58.36,208.13) v4(58.36,204.55) v4(58.36,203.55) v4(58.36,202.55) v4(58.36,201.55) v4(58.36,200.55) v4(58.36,199.55) v4(58.36,198.55) v4(58.36,195.54) v4(58.36,194.54) v4(58.36,193.54) v4(58.36,192.54) v4(58.36,191.54) v4(58.36,190.54) v4(58.36,189.54) v4(58.36,188.54) v4(58.36,187.54) v4(58.36,186.54) v4(58.36,185.54) v4(58.36,184.54) v4(58.36,181.55) v4(58.36,180.55) v4(58.35,177.1) v4(58.35,176.1) v4(58.35,175.1) v4(58.35,174.1) v4(58.35,173.1) v4(58.35,172.1) v4(58.35,171.1) v4(58.35,170.1) v4(58.35,169.1) v4(58.35,168.1) v4(58.35,167.1) v4(58.35,166.1) v4(58.35,165.1) v4(58.35,164.1) v4(58.35,163.1) v4(58.35,162.1) v4(58.35,161.1) v4(58.35,160.1) v4(58.35,159.1) v4(58.35,158.1) v4(58.35,157.1) v4(58.35,156.1) v4(58.35,155.1) v4(58.35,154.1) v4(58.35,153.1) v4(58.35,152.1) v4(58.35,151.1) v4(58.35,150.1) v4(58.35,149.1) v4(58.35,148.1) v4(58.35,147.1) v4(58.35,146.1) v4(58.35,145.1) v4(58.35,144.1) v4(58.35,143.1) v4(58.35,142.1) v4(58.35,141.1) v4(58.35,140.1) v4(58.35,139.1) v4(58.35,138.1) v4(58.35,137.1) v4(58.35,136.1) v4(58.35,135.1) v4(58.36,131.84) v4(58.36,130.84) v4(58.36,129.84) v4(58.35,126.54) v4(58.35,125.54) v4(58.35,124.54) v4(58.35,123.54) v4(58.35,122.54) v4(58.35,121.54) v4(58.35,120.54) v4(58.35,119.54) v4(58.35,118.54) v4(58.35,117.54) v4(58.35,116.54) v4(58.35,115.54) v4(58.35,114.54) v4(58.35,113.54) v4(58.35,112.54) v4(58.35,111.54) v4(58.35,110.54) v4(58.35,109.54) v4(58.35,108.54) v4(58.35,107.54) v4(58.35,106.54) v4(58.35,105.54) v4(58.35,104.54) v4(58.35,103.54) v4(58.35,102.54) v4(58.35,101.54) v4(58.35,100.54) v4(58.35,99.54) v4(58.35,98.54) v4(58.35,97.54) v4(58.35,96.54) v4(58.35,95.54) v4(58.35,94.54) v4(58.35,93.54) v4(58.35,92.54) v4(58.35,91.54) v4(58.35,90.54) v4(58.35,89.54) v4(58.35,88.54) v4(58.35,87.54) v4(58.35,86.54) v4(58.35,85.54) v4(58.35,84.54) v4(58.35,83.54) v4(58.35,82.54) v4(58.35,81.54) v4(58.35,80.54) v4(58.35,79.54) v4(58.35,78.54) v4(58.35,77.54) v4(58.35,76.54) v4(58.35,75.54) v4(58.35,74.54) v4(58.35,73.54) v4(58.36,64.46) v4(58.36,63.46) v4(58.36,62.46) v4(58.36,61.46) v4(58.36,60.46) v4(58.36,59.46) v4(58.36,58.46) v4(58.36,57.46) v4(58.36,56.46) v4(58.36,55.46) v4(58.36,54.46) v4(58.36,53.46) v4(58.36,52.46) v4(58.36,51.46) v4(58.36,50.46) v4(58.36,49.46) v4(58.36,48.46) v4(58.36,47.46) v4(58.36,46.46) v4(58.36,45.46) v4(58.28,39.51) v4(58.36,35.81) v4(58.36,34.81) v4(58.36,33.81) v4(58.36,32.81) v4(58.29,28.36) v4(58.34,23.76) v4(58.37,226.34) v4(58.37,70.71) v4(58.37,69.93) v4(58.39,67.87) v4(58.39,67.18) v4(58.39,66.47) v4(58.37,42.8) v4(58.37,41.58) v4(58.37,38.43) v4(58.52,227.74) v4(58.48,218.1) v4(58.64,220.21) v4(58.6,26.96) v4(58.75,31.15) v4(59.05,221.6) v4(59.11,25.16) v4(59.19,217.39) v4(59.29,28.36) v4(59.34,23.76) v4(59.37,226.34) v4(59.46,31.85) v4(59.52,227.74) v4(59.64,220.21) v4(59.6,26.96) v4(59.75,216.56) v4(59.75,215.56) v4(59.75,214.56) v4(59.75,209.84) v4(59.74,207.9) v4(59.75,206.49) v4(59.75,205.49) v4(59.75,204.49) v4(59.75,203.49) v4(59.75,202.49) v4(59.75,201.49) v4(59.75,200.49) v4(59.75,199.49) v4(59.74,198.48) v4(59.75,197.56) v4(59.75,196.14) v4(59.75,195.14) v4(59.75,194.14) v4(59.75,193.14) v4(59.75,192.14) v4(59.75,191.14) v4(59.75,190.14) v4(59.75,189.14) v4(59.75,188.14) v4(59.75,187.14) v4(59.75,186.14) v4(59.75,185.14) v4(59.74,184.35) v4(59.74,183.57) v4(59.75,182.17) v4(59.75,181.17) v4(59.75,180.17) v4(59.75,179.17) v4(59.75,178.17) v4(59.76,177.17) v4(59.76,176.17) v4(59.76,175.17) v4(59.76,174.17) v4(59.76,173.17) v4(59.76,172.17) v4(59.76,171.17) v4(59.76,170.17) v4(59.76,169.17) v4(59.76,168.17) v4(59.76,167.17) v4(59.76,166.17) v4(59.76,165.17) v4(59.76,164.17) v4(59.76,163.17) v4(59.76,162.17) v4(59.76,161.17) v4(59.76,160.17) v4(59.76,159.17) v4(59.76,158.17) v4(59.76,157.17) v4(59.76,156.17) v4(59.76,155.17) v4(59.76,154.17) v4(59.76,153.17) v4(59.76,152.17) v4(59.76,151.17) v4(59.76,150.17) v4(59.76,149.17) v4(59.76,148.17) v4(59.76,147.17) v4(59.76,146.17) v4(59.76,145.17) v4(59.76,144.17) v4(59.76,143.17) v4(59.76,142.17) v4(59.76,141.17) v4(59.76,140.17) v4(59.76,139.17) v4(59.76,138.17) v4(59.76,137.17) v4(59.76,136.17) v4(59.76,135.17) v4(59.76,134.17) v4(59.75,133.17) v4(59.75,132.17) v4(59.75,131.17) v4(59.75,130.17) v4(59.75,129.17) v4(59.75,128.17) v4(59.76,127.17) v4(59.76,126.17) v4(59.76,125.17) v4(59.76,124.17) v4(59.76,123.17) v4(59.76,122.17) v4(59.76,121.17) v4(59.76,120.17) v4(59.76,119.17) v4(59.76,118.17) v4(59.76,117.17) v4(59.76,116.17) v4(59.76,115.17) v4(59.76,114.17) v4(59.76,113.17) v4(59.76,112.17) v4(59.76,111.17) v4(59.76,110.17) v4(59.76,109.17) v4(59.76,108.17) v4(59.76,107.17) v4(59.76,106.17) v4(59.76,105.17) v4(59.76,104.17) v4(59.76,103.17) v4(59.76,102.17) v4(59.76,101.17) v4(59.76,100.17) v4(59.76,99.17) v4(59.76,98.17) v4(59.76,97.17) v4(59.76,96.17) v4(59.76,95.17) v4(59.76,94.17) v4(59.76,93.17) v4(59.76,92.17) v4(59.76,91.17) v4(59.76,90.17) v4(59.76,89.17) v4(59.76,88.17) v4(59.76,87.17) v4(59.76,86.17) v4(59.76,85.17) v4(59.76,84.17) v4(59.76,83.17) v4(59.76,82.17) v4(59.76,81.17) v4(59.76,80.17) v4(59.76,79.17) v4(59.76,78.17) v4(59.76,77.17) v4(59.76,76.17) v4(59.76,75.17) v4(59.76,74.17) v4(59.76,73.17) v4(59.76,72.17) v4(59.75,71.17) v4(59.75,70.17) v4(59.74,67.87) v4(59.74,67.16) v4(59.74,66.47) v4(59.75,65.05) v4(59.75,64.05) v4(59.75,63.05) v4(59.75,62.05) v4(59.75,61.05) v4(59.75,60.05) v4(59.75,59.05) v4(59.75,58.05) v4(59.75,57.05) v4(59.75,56.05) v4(59.75,55.05) v4(59.75,54.05) v4(59.75,53.05) v4(59.75,52.05) v4(59.75,51.05) v4(59.75,50.05) v4(59.75,49.05) v4(59.75,48.05) v4(59.75,47.05) v4(59.75,46.05) v4(59.75,45.05) v4(59.75,44.05) v4(59.75,43.05) v4(59.75,40.99) v4(59.74,39.75) v4(59.75,37.81) v4(59.75,36.81) v4(59.75,35.81) v4(59.75,34.81) v4(59.75,33.81) v4(59.75,32.81) v4(59.84,213.57) v4(59.78,211.65) v4(59.77,210.77) v4(60.05,221.6) v4(60.11,25.16) v4(60.26,28.61) v4(60.3,209.3) v4(60.28,207.34) v4(60.35,41.61) v4(60.35,40.36) v4(60.34,23.76) v4(60.37,226.34) v4(60.4,213) v4(60.52,227.74) v4(60.52,219.72) v4(60.51,43.71) v4(60.6,26.98) v4(60.75,197.56) v4(60.68,181.52) v4(60.67,70.56) v4(60.86,210.52) v4(60.9,218.79) v4(60.9,217.79) v4(60.9,216.79) v4(60.9,215.79) v4(60.9,214.79) v4(60.9,213.79) v4(60.91,212.47) v4(60.88,209.55) v4(60.88,208.69) v4(60.9,206.55) v4(60.9,205.55) v4(60.9,204.55) v4(60.9,203.55) v4(60.9,202.55) v4(60.9,201.55) v4(60.9,200.55) v4(60.9,199.55) v4(60.9,198.55) v4(60.9,195.54) v4(60.9,194.54) v4(60.9,193.54) v4(60.9,192.54) v4(60.9,191.54) v4(60.9,190.54) v4(60.9,189.54) v4(60.9,188.54) v4(60.9,187.54) v4(60.9,186.54) v4(60.9,185.54) v4(60.9,184.54) v4(60.91,183.26) v4(60.89,180.54) v4(60.89,179.54) v4(60.89,178.54) v4(60.89,177.54) v4(60.89,176.54) v4(60.89,175.54) v4(60.89,174.54) v4(60.89,173.54) v4(60.89,172.54) v4(60.89,171.54) v4(60.89,170.54) v4(60.89,169.54) v4(60.89,168.54) v4(60.89,167.54) v4(60.89,166.54) v4(60.89,165.54) v4(60.89,164.54) v4(60.89,163.54) v4(60.89,162.54) v4(60.89,161.54) v4(60.89,160.54) v4(60.89,159.54) v4(60.89,158.54) v4(60.89,157.54) v4(60.89,156.54) v4(60.89,155.54) v4(60.89,154.54) v4(60.89,153.54) v4(60.89,152.54) v4(60.89,151.54) v4(60.89,150.54) v4(60.89,149.54) v4(60.89,148.54) v4(60.89,147.54) v4(60.89,146.54) v4(60.89,145.54) v4(60.89,144.54) v4(60.89,143.54) v4(60.89,142.54) v4(60.89,141.54) v4(60.89,140.54) v4(60.89,139.54) v4(60.89,138.54) v4(60.89,137.54) v4(60.89,136.54) v4(60.89,135.54) v4(60.89,134.54) v4(60.89,133.54) v4(60.89,132.54) v4(60.89,131.54) v4(60.89,130.54) v4(60.89,129.54) v4(60.89,128.54) v4(60.89,127.54) v4(60.89,126.54) v4(60.89,125.54) v4(60.89,124.54) v4(60.89,123.54) v4(60.89,122.54) v4(60.89,121.54) v4(60.89,120.54) v4(60.89,119.54) v4(60.89,118.54) v4(60.89,117.54) v4(60.89,116.54) v4(60.89,115.54) v4(60.89,114.54) v4(60.89,113.54) v4(60.89,112.54) v4(60.89,111.54) v4(60.89,110.54) v4(60.89,109.54) v4(60.89,108.54) v4(60.89,107.54) v4(60.89,106.54) v4(60.89,105.54) v4(60.89,104.54) v4(60.89,103.54) v4(60.89,102.54) v4(60.89,101.54) v4(60.89,100.54) v4(60.89,99.54) v4(60.89,98.54) v4(60.89,97.54) v4(60.89,96.54) v4(60.89,95.54) v4(60.89,94.54) v4(60.89,93.54) v4(60.89,92.54) v4(60.89,91.54) v4(60.89,90.54) v4(60.89,89.54) v4(60.89,88.54) v4(60.89,87.54) v4(60.89,86.54) v4(60.89,85.54) v4(60.89,84.54) v4(60.89,83.54) v4(60.89,82.54) v4(60.89,81.54) v4(60.89,80.54) v4(60.89,79.54) v4(60.89,78.54) v4(60.89,77.54) v4(60.89,76.54) v4(60.89,75.54) v4(60.89,74.54) v4(60.89,73.54) v4(60.89,72.54) v4(60.89,71.54) v4(60.9,68.44) v4(60.9,67.44) v4(60.91,66.5) v4(60.9,64.63) v4(60.9,63.63) v4(60.9,62.63) v4(60.9,61.63) v4(60.9,60.63) v4(60.9,59.63) v4(60.9,58.63) v4(60.9,57.63) v4(60.9,56.63) v4(60.9,55.63) v4(60.9,54.63) v4(60.9,53.63) v4(60.9,52.63) v4(60.9,51.63) v4(60.9,50.63) v4(60.9,49.63) v4(60.9,48.63) v4(60.9,47.63) v4(60.9,46.63) v4(60.9,45.63) v4(60.9,44.63) v4(60.93,42.19) v4(60.93,41) v4(60.9,38.38) v4(60.9,37.38) v4(60.9,36.38) v4(60.9,35.38) v4(60.9,34.38) v4(60.9,33.38) v4(60.9,32.38) v4(60.9,31.38) v4(60.9,30.38) v4(60.9,29.38) v4(60.98,221.24) v4(61.11,25.16) v4(61.31,27.68) v4(61.34,23.76) v4(61.37,226.34) v4(61.52,227.74) v4(61.69,220.53) v4(62.02,28.39) v4(62.11,25.16) v4(62.18,225.76) v4(62.29,219.74) v4(62.29,218.74) v4(62.29,217.74) v4(62.29,216.74) v4(62.29,215.74) v4(62.29,214.74) v4(62.29,213.74) v4(62.29,212.74) v4(62.29,211.74) v4(62.28,209.17) v4(62.29,207.76) v4(62.29,206.76) v4(62.29,205.76) v4(62.29,204.76) v4(62.29,203.76) v4(62.29,202.76) v4(62.29,201.76) v4(62.29,200.76) v4(62.29,199.76) v4(62.29,198.76) v4(62.29,194.42) v4(62.29,193.42) v4(62.29,192.42) v4(62.29,191.42) v4(62.29,190.42) v4(62.29,189.42) v4(62.29,188.42) v4(62.29,187.42) v4(62.29,186.42) v4(62.29,185.42) v4(62.29,184.42) v4(62.29,183.42) v4(62.3,181.9) v4(62.3,180.9) v4(62.3,179.9) v4(62.3,178.9) v4(62.3,177.9) v4(62.3,176.9) v4(62.3,175.9) v4(62.3,174.9) v4(62.3,173.9) v4(62.3,172.9) v4(62.3,171.9) v4(62.3,170.9) v4(62.3,169.9) v4(62.3,168.9) v4(62.3,167.9) v4(62.3,166.9) v4(62.3,165.9) v4(62.3,164.9) v4(62.3,163.9) v4(62.3,162.9) v4(62.3,161.9) v4(62.3,160.9) v4(62.3,159.9) v4(62.3,158.9) v4(62.3,157.9) v4(62.3,156.9) v4(62.3,155.9) v4(62.3,154.9) v4(62.3,153.9) v4(62.3,152.9) v4(62.3,151.9) v4(62.3,150.9) v4(62.3,149.9) v4(62.3,148.9) v4(62.3,147.9) v4(62.3,146.9) v4(62.3,145.9) v4(62.3,144.9) v4(62.3,143.9) v4(62.3,142.9) v4(62.3,141.9) v4(62.3,140.9) v4(62.3,139.9) v4(62.3,138.9) v4(62.3,137.9) v4(62.3,136.9) v4(62.3,135.9) v4(62.3,134.9) v4(62.3,133.9) v4(62.3,132.9) v4(62.3,131.9) v4(62.3,130.9) v4(62.3,129.9) v4(62.3,128.9) v4(62.3,127.9) v4(62.3,126.9) v4(62.3,125.9) v4(62.3,124.9) v4(62.3,123.9) v4(62.3,122.9) v4(62.3,121.9) v4(62.3,120.9) v4(62.3,119.9) v4(62.3,118.9) v4(62.3,117.9) v4(62.3,116.9) v4(62.3,115.9) v4(62.3,114.9) v4(62.3,113.9) v4(62.3,112.9) v4(62.3,111.9) v4(62.3,110.9) v4(62.3,109.9) v4(62.3,108.9) v4(62.3,107.9) v4(62.3,106.9) v4(62.3,105.9) v4(62.3,104.9) v4(62.3,103.9) v4(62.3,102.9) v4(62.3,101.9) v4(62.3,100.9) v4(62.3,99.9) v4(62.3,98.9) v4(62.3,97.9) v4(62.3,96.9) v4(62.3,95.9) v4(62.3,94.9) v4(62.3,93.9) v4(62.3,92.9) v4(62.3,91.9) v4(62.3,90.9) v4(62.3,89.9) v4(62.3,88.9) v4(62.3,87.9) v4(62.3,86.9) v4(62.3,85.9) v4(62.3,84.9) v4(62.3,83.9) v4(62.3,82.9) v4(62.3,81.9) v4(62.3,80.9) v4(62.3,79.9) v4(62.3,78.9) v4(62.3,77.9) v4(62.3,76.9) v4(62.3,75.9) v4(62.3,74.9) v4(62.3,73.9) v4(62.3,72.9) v4(62.3,71.9) v4(62.3,70.9) v4(62.29,69.9) v4(62.29,68.9) v4(62.29,67.9) v4(62.29,66.9) v4(62.29,65.05) v4(62.29,64.05) v4(62.29,63.05) v4(62.29,62.05) v4(62.29,61.05) v4(62.29,60.05) v4(62.29,59.05) v4(62.29,58.05) v4(62.29,57.05) v4(62.29,56.05) v4(62.29,55.05) v4(62.29,54.05) v4(62.29,53.05) v4(62.29,52.05) v4(62.29,51.05) v4(62.29,50.05) v4(62.29,49.05) v4(62.29,48.05) v4(62.29,47.05) v4(62.29,46.05) v4(62.29,45.05) v4(62.29,44.05) v4(62.29,43.05) v4(62.28,42.34) v4(62.29,40.35) v4(62.29,39.35) v4(62.29,38.35) v4(62.29,37.35) v4(62.29,36.35) v4(62.29,35.35) v4(62.29,34.35) v4(62.29,33.35) v4(62.29,32.35) v4(62.29,31.35) v4(62.29,30.35) v4(62.29,29.35) v4(62.34,23.76) v4(62.47,227.44) v4(62.52,197.56) v4(62.61,210.79) v4(62.82,208.61) v4(62.8,195.28) v4(62.88,225.05) v4(63.03,67.58) v4(63.01,25.59) v4(63.18,226.73) v4(63.23,196.85) v4(63.26,43.3) v4(63.33,23.94) v4(63.44,224.22) v4(63.44,223.22) v4(63.44,222.22) v4(63.44,221.22) v4(63.44,220.22) v4(63.44,219.22) v4(63.44,218.22) v4(63.44,217.22) v4(63.44,216.22) v4(63.44,215.22) v4(63.44,214.22) v4(63.44,213.22) v4(63.44,212.22) v4(63.44,211.22) v4(63.44,210.22) v4(63.44,207.83) v4(63.44,206.83) v4(63.44,205.83) v4(63.44,204.83) v4(63.44,203.83) v4(63.44,202.83) v4(63.44,201.83) v4(63.44,200.83) v4(63.44,199.83) v4(63.44,198.83) v4(63.44,197.83) v4(63.43,194.5) v4(63.43,193.5) v4(63.43,192.5) v4(63.43,191.5) v4(63.43,190.5) v4(63.43,189.5) v4(63.43,188.5) v4(63.43,187.5) v4(63.43,186.5) v4(63.43,185.5) v4(63.43,184.5) v4(63.43,183.5) v4(63.43,182.5) v4(63.43,181.5) v4(63.43,180.5) v4(63.43,179.5) v4(63.43,178.5) v4(63.43,177.5) v4(63.43,176.5) v4(63.43,175.5) v4(63.43,174.5) v4(63.43,173.5) v4(63.43,172.5) v4(63.43,171.5) v4(63.43,170.5) v4(63.43,169.5) v4(63.43,168.5) v4(63.43,167.5) v4(63.43,166.5) v4(63.43,165.5) v4(63.43,164.5) v4(63.43,163.5) v4(63.43,162.5) v4(63.43,161.5) v4(63.43,160.5) v4(63.43,159.5) v4(63.43,158.5) v4(63.43,157.5) v4(63.43,156.5) v4(63.43,155.5) v4(63.43,154.5) v4(63.43,153.5) v4(63.43,152.5) v4(63.43,151.5) v4(63.43,150.5) v4(63.43,149.5) v4(63.43,148.5) v4(63.43,147.5) v4(63.43,146.5) v4(63.43,145.5) v4(63.43,144.5) v4(63.43,143.5) v4(63.43,142.5) v4(63.43,141.5) v4(63.43,140.5) v4(63.43,139.5) v4(63.43,138.5) v4(63.43,137.5) v4(63.43,136.5) v4(63.43,135.5) v4(63.43,134.5) v4(63.43,133.5) v4(63.43,132.5) v4(63.43,131.5) v4(63.43,130.5) v4(63.43,129.5) v4(63.43,128.5) v4(63.43,127.5) v4(63.43,126.5) v4(63.43,125.5) v4(63.43,124.5) v4(63.43,123.5) v4(63.43,122.5) v4(63.43,121.5) v4(63.43,120.5) v4(63.43,119.5) v4(63.43,118.5) v4(63.43,117.5) v4(63.43,116.5) v4(63.43,115.5) v4(63.43,114.5) v4(63.43,113.5) v4(63.43,112.5) v4(63.43,111.5) v4(63.43,110.5) v4(63.43,109.5) v4(63.43,108.5) v4(63.43,107.5) v4(63.43,106.5) v4(63.43,105.5) v4(63.43,104.5) v4(63.43,103.5) v4(63.43,102.5) v4(63.43,101.5) v4(63.43,100.5) v4(63.43,99.5) v4(63.43,98.5) v4(63.43,97.5) v4(63.43,96.5) v4(63.43,95.5) v4(63.43,94.5) v4(63.43,93.5) v4(63.43,92.5) v4(63.43,91.5) v4(63.43,90.5) v4(63.43,89.5) v4(63.43,88.5) v4(63.43,87.5) v4(63.43,86.5) v4(63.43,85.5) v4(63.43,84.5) v4(63.43,83.5) v4(63.43,82.5) v4(63.43,81.5) v4(63.43,80.5) v4(63.43,79.5) v4(63.43,78.5) v4(63.43,77.5) v4(63.43,76.5) v4(63.43,75.5) v4(63.43,74.5) v4(63.43,73.5) v4(63.43,72.5) v4(63.43,71.5) v4(63.43,70.5) v4(63.43,69.5) v4(63.43,68.5) v4(63.44,65.99) v4(63.44,65.28) v4(63.44,64.28) v4(63.44,63.28) v4(63.44,62.28) v4(63.44,61.28) v4(63.44,60.28) v4(63.44,59.28) v4(63.44,58.28) v4(63.44,57.28) v4(63.44,56.28) v4(63.44,55.28) v4(63.44,54.28) v4(63.44,53.28) v4(63.44,52.28) v4(63.44,51.28) v4(63.44,50.28) v4(63.44,49.28) v4(63.44,48.28) v4(63.44,47.28) v4(63.44,46.28) v4(63.44,45.28) v4(63.44,44.28) v4(63.45,41.5) v4(63.44,40.5) v4(63.44,39.5) v4(63.44,38.5) v4(63.44,37.5) v4(63.44,36.5) v4(63.44,35.5) v4(63.44,34.5) v4(63.44,33.5) v4(63.44,32.5) v4(63.44,31.5) v4(63.44,30.5) v4(63.44,29.5) v4(63.44,28.5) v4(63.44,27.5) v4(63.44,26.5) v4(63.89,226.02) v4(64.04,24.64) v4(64.6,225.32) v4(64.74,25.35) v4(64.83,224.35) v4(64.83,223.35) v4(64.83,222.35) v4(64.83,221.35) v4(64.83,220.35) v4(64.83,219.35) v4(64.83,218.35) v4(64.83,217.35) v4(64.83,216.35) v4(64.83,215.35) v4(64.83,214.35) v4(64.83,213.35) v4(64.83,212.35) v4(64.83,211.35) v4(64.83,210.35) v4(64.83,209.35) v4(64.83,208.35) v4(64.83,207.35) v4(64.83,206.35) v4(64.83,205.35) v4(64.83,204.35) v4(64.83,203.35) v4(64.83,202.35) v4(64.83,201.35) v4(64.83,200.35) v4(64.83,199.35) v4(64.83,198.35) v4(64.83,197.35) v4(64.83,196.35) v4(64.83,195.35) v4(64.84,194.35) v4(64.84,193.35) v4(64.84,192.35) v4(64.84,191.35) v4(64.84,190.35) v4(64.84,189.35) v4(64.84,188.35) v4(64.84,187.35) v4(64.84,186.35) v4(64.84,185.35) v4(64.84,184.35) v4(64.84,183.35) v4(64.84,182.35) v4(64.84,181.35) v4(64.84,180.35) v4(64.84,179.35) v4(64.84,178.35) v4(64.84,177.35) v4(64.84,176.35) v4(64.84,175.35) v4(64.84,174.35) v4(64.84,173.35) v4(64.84,172.35) v4(64.84,171.35) v4(64.84,170.35) v4(64.84,169.35) v4(64.84,168.35) v4(64.84,167.35) v4(64.84,166.35) v4(64.84,165.35) v4(64.84,164.35) v4(64.84,163.35) v4(64.84,162.35) v4(64.84,161.35) v4(64.84,160.35) v4(64.84,159.35) v4(64.84,158.35) v4(64.84,157.35) v4(64.84,156.35) v4(64.84,155.35) v4(64.84,154.35) v4(64.84,153.35) v4(64.84,152.35) v4(64.84,151.35) v4(64.84,150.35) v4(64.84,149.35) v4(64.84,148.35) v4(64.84,147.35) v4(64.84,146.35) v4(64.84,145.35) v4(64.84,144.35) v4(64.84,143.35) v4(64.84,142.35) v4(64.84,141.35) v4(64.84,140.35) v4(64.84,139.35) v4(64.84,138.35) v4(64.84,137.35) v4(64.84,136.35) v4(64.84,135.35) v4(64.84,134.35) v4(64.84,133.35) v4(64.84,132.35) v4(64.84,131.35) v4(64.84,130.35) v4(64.84,129.35) v4(64.84,128.35) v4(64.84,127.35) v4(64.84,126.35) v4(64.84,125.35) v4(64.84,124.35) v4(64.84,123.35) v4(64.84,122.35) v4(64.84,121.35) v4(64.84,120.35) v4(64.84,119.35) v4(64.84,118.35) v4(64.84,117.35) v4(64.84,116.35) v4(64.84,115.35) v4(64.84,114.35) v4(64.84,113.35) v4(64.84,112.35) v4(64.84,111.35) v4(64.84,110.35) v4(64.84,109.35) v4(64.84,108.35) v4(64.84,107.35) v4(64.84,106.35) v4(64.84,105.35) v4(64.84,104.35) v4(64.84,103.35) v4(64.84,102.35) v4(64.84,101.35) v4(64.84,100.35) v4(64.84,99.35) v4(64.84,98.35) v4(64.84,97.35) v4(64.84,96.35) v4(64.84,95.35) v4(64.84,94.35) v4(64.84,93.35) v4(64.84,92.35) v4(64.84,91.35) v4(64.84,90.35) v4(64.84,89.35) v4(64.84,88.35) v4(64.84,87.35) v4(64.84,86.35) v4(64.84,85.35) v4(64.84,84.35) v4(64.84,83.35) v4(64.84,82.35) v4(64.84,81.35) v4(64.84,80.35) v4(64.84,79.35) v4(64.84,78.35) v4(64.84,77.35) v4(64.84,76.35) v4(64.84,75.35) v4(64.84,74.35) v4(64.84,73.35) v4(64.84,72.35) v4(64.84,71.35) v4(64.84,70.35) v4(64.84,69.35) v4(64.84,68.35) v4(64.83,67.35) v4(64.83,66.35) v4(64.83,65.35) v4(64.83,64.35) v4(64.83,63.35) v4(64.83,62.35) v4(64.83,61.35) v4(64.83,60.35) v4(64.83,59.35) v4(64.83,58.35) v4(64.83,57.35) v4(64.83,56.35) v4(64.83,55.35) v4(64.83,54.35) v4(64.83,53.35) v4(64.83,52.35) v4(64.83,51.35) v4(64.83,50.35) v4(64.83,49.35) v4(64.83,48.35) v4(64.83,47.35) v4(64.83,46.35) v4(64.83,45.35) v4(64.83,44.35) v4(64.83,43.35) v4(64.83,42.35) v4(64.83,41.35) v4(64.83,40.35) v4(64.83,39.35) v4(64.83,38.35) v4(64.83,37.35) v4(64.83,36.35) v4(64.83,35.35) v4(64.83,34.35) v4(64.83,33.35) v4(64.83,32.35) v4(64.83,31.35) v4(64.83,30.35) v4(64.83,29.35) v4(64.83,28.35) v4(64.83,27.35) v4(64.83,26.35) v5(0.89,249.3) v5(0.89,248.79) v5(0.89,248.28) v5(0.89,247.78) v5(0.89,247.27) v5(0.89,246.76) v5(0.89,246.25) v5(0.89,245.75) v5(0.89,245.24) v5(0.89,244.73) v5(0.89,244.22) v5(0.89,243.71) v5(0.89,243.21) v5(0.89,242.7) v5(0.89,242.19) v5(0.89,241.68) v5(0.89,241.17) v5(0.89,240.66) v5(0.89,240.16) v5(0.89,239.65) v5(0.89,239.14) v5(0.89,238.63) v5(0.89,238.12) v5(0.89,237.62) v5(0.89,237.11) v5(0.89,236.6) v5(0.89,236.09) v5(0.89,235.59) v5(0.89,235.08) v5(0.89,234.57) v5(0.89,234.06) v5(0.89,233.55) v5(0.89,233.05) v5(0.89,232.54) v5(0.89,232.03) v5(0.89,231.52) v5(0.89,231.01) v5(0.89,230.5) v5(0.89,230) v5(0.89,229.49) v5(0.89,228.98) v5(0.89,228.47) v5(0.89,227.97) v5(0.89,227.46) v5(0.89,226.95) v5(0.89,226.44) v5(0.89,225.93) v5(0.89,225.43) v5(0.89,224.92) v5(0.89,224.41) v5(0.89,223.9) v5(0.89,223.39) v5(0.89,222.88) v5(0.89,222.38) v5(0.89,221.87) v5(0.89,221.36) v5(0.89,220.85) v5(0.89,220.34) v5(0.89,219.84) v5(0.89,219.33) v5(0.89,218.82) v5(0.89,218.31) v5(0.89,217.81) v5(0.89,217.3) v5(0.89,216.79) v5(0.89,216.28) v5(0.89,215.77) v5(0.89,215.27) v5(0.89,214.76) v5(0.89,214.25) v5(0.89,213.74) v5(0.89,213.23) v5(0.89,212.72) v5(0.89,212.22) v5(0.89,211.71) v5(0.89,211.2) v5(0.89,210.69) v5(0.89,210.19) v5(0.89,209.68) v5(0.89,209.17) v5(0.89,208.66) v5(0.89,208.15) v5(0.89,207.65) v5(0.89,207.14) v5(0.89,206.63) v5(0.89,206.12) v5(0.89,205.61) v5(0.89,205.1) v5(0.89,204.6) v5(0.89,204.09) v5(0.89,203.58) v5(0.89,203.07) v5(0.89,202.56) v5(0.89,202.06) v5(0.89,201.55) v5(0.89,201.04) v5(0.89,200.53) v5(0.89,200.03) v5(0.89,199.52) v5(0.89,199.01) v5(0.89,198.5) v5(0.89,197.99) v5(0.89,197.49) v5(0.89,196.98) v5(0.89,196.47) v5(0.89,195.96) v5(0.89,195.45) v5(0.89,194.94) v5(0.89,194.44) v5(0.89,193.93) v5(0.89,193.42) v5(0.89,192.91) v5(0.89,192.41) v5(0.89,191.9) v5(0.89,191.39) v5(0.89,190.88) v5(0.89,190.37) v5(0.89,189.87) v5(0.89,189.36) v5(0.89,188.85) v5(0.89,188.34) v5(0.89,187.83) v5(0.89,187.33) v5(0.89,186.82) v5(0.89,186.31) v5(0.89,185.8) v5(0.89,185.29) v5(0.89,184.78) v5(0.89,184.28) v5(0.89,183.77) v5(0.89,183.26) v5(0.89,182.75) v5(0.89,182.25) v5(0.89,181.74) v5(0.89,181.23) v5(0.89,180.72) v5(0.89,180.21) v5(0.89,179.71) v5(0.89,179.2) v5(0.89,178.69) v5(0.89,178.18) v5(0.89,177.67) v5(0.89,177.16) v5(0.89,176.66) v5(0.89,176.15) v5(0.89,175.64) v5(0.89,175.13) v5(0.89,174.62) v5(0.89,174.12) v5(0.89,173.61) v5(0.89,173.1) v5(0.89,172.59) v5(0.89,172.09) v5(0.89,171.58) v5(0.89,171.07) v5(0.89,170.56) v5(0.89,170.05) v5(0.89,169.55) v5(0.89,169.04) v5(0.89,168.53) v5(0.89,168.02) v5(0.89,167.51) v5(0.89,167) v5(0.89,166.5) v5(0.89,165.99) v5(0.89,165.48) v5(0.89,164.97) v5(0.89,164.47) v5(0.89,163.96) v5(0.89,163.45) v5(0.89,162.94) v5(0.89,162.43) v5(0.89,161.93) v5(0.89,161.42) v5(0.89,160.91) v5(0.89,160.4) v5(0.89,159.89) v5(0.89,159.38) v5(0.89,158.88) v5(0.89,158.37) v5(0.89,157.86) v5(0.89,157.35) v5(0.89,156.84) v5(0.89,156.34) v5(0.89,155.83) v5(0.89,155.32) v5(0.89,154.81) v5(0.89,154.31) v5(0.89,153.8) v5(0.89,153.29) v5(0.89,152.78) v5(0.89,152.27) v5(0.89,151.77) v5(0.89,151.26) v5(0.89,150.75) v5(0.89,150.24) v5(0.89,149.73) v5(0.89,149.22) v5(0.89,148.72) v5(0.89,148.21) v5(0.89,147.7) v5(0.89,147.19) v5(0.89,146.69) v5(0.89,146.18) v5(0.89,145.67) v5(0.89,145.16) v5(0.89,144.65) v5(0.89,144.15) v5(0.89,143.64) v5(0.89,143.13) v5(0.89,142.62) v5(0.89,142.11) v5(0.89,141.6) v5(0.89,141.1) v5(0.89,140.59) v5(0.89,140.08) v5(0.89,139.57) v5(0.89,139.06) v5(0.89,138.56) v5(0.89,138.05) v5(0.89,137.54) v5(0.89,137.03) v5(0.89,136.53) v5(0.89,136.02) v5(0.89,135.51) v5(0.89,135) v5(0.89,134.49) v5(0.89,133.99) v5(0.89,133.48) v5(0.89,132.97) v5(0.89,132.46) v5(0.89,131.95) v5(0.89,131.44) v5(0.89,130.94) v5(0.89,130.43) v5(0.89,129.92) v5(0.89,129.41) v5(0.89,128.91) v5(0.89,128.4) v5(0.89,127.89) v5(0.89,127.38) v5(0.89,126.87) v5(0.89,126.37) v5(0.89,125.86) v5(0.89,125.35) v5(0.89,124.84) v5(0.89,124.33) v5(0.89,123.83) v5(0.89,123.32) v5(0.89,122.81) v5(0.89,122.3) v5(0.89,121.79) v5(0.89,121.28) v5(0.89,120.78) v5(0.89,120.27) v5(0.89,119.76) v5(0.89,119.25) v5(0.89,118.75) v5(0.89,118.24) v5(0.89,117.73) v5(0.89,117.22) v5(0.89,116.71) v5(0.89,116.2) v5(0.89,115.7) v5(0.89,115.19) v5(0.89,114.68) v5(0.89,114.17) v5(0.89,113.67) v5(0.89,113.16) v5(0.89,112.65) v5(0.89,112.14) v5(0.89,111.63) v5(0.89,111.12) v5(0.89,110.62) v5(0.89,110.11) v5(0.89,109.6) v5(0.89,109.09) v5(0.89,108.59) v5(0.89,108.08) v5(0.89,107.57) v5(0.89,107.06) v5(0.89,106.55) v5(0.89,106.05) v5(0.89,105.54) v5(0.89,105.03) v5(0.89,104.52) v5(0.89,104.01) v5(0.89,103.51) v5(0.89,103) v5(0.89,102.49) v5(0.89,101.98) v5(0.89,101.47) v5(0.89,100.97) v5(0.89,100.46) v5(0.89,99.95) v5(0.89,99.44) v5(0.89,98.93) v5(0.89,98.42) v5(0.89,97.92) v5(0.89,97.41) v5(0.89,96.9) v5(0.89,96.39) v5(0.89,95.89) v5(0.89,95.38) v5(0.89,94.87) v5(0.89,94.36) v5(0.89,93.85) v5(0.89,93.34) v5(0.89,92.84) v5(0.89,92.33) v5(0.89,91.82) v5(0.89,91.31) v5(0.89,90.81) v5(0.89,90.3) v5(0.89,89.79) v5(0.89,89.28) v5(0.89,88.77) v5(0.89,88.27) v5(0.89,87.76) v5(0.89,87.25) v5(0.89,86.74) v5(0.89,86.23) v5(0.89,85.73) v5(0.89,85.22) v5(0.89,84.71) v5(0.89,84.2) v5(0.89,83.69) v5(0.89,83.19) v5(0.89,82.68) v5(0.89,82.17) v5(0.89,81.66) v5(0.89,81.15) v5(0.89,80.65) v5(0.89,80.14) v5(0.89,79.63) v5(0.89,79.12) v5(0.89,78.61) v5(0.89,78.11) v5(0.89,77.6) v5(0.89,77.09) v5(0.89,76.58) v5(0.89,76.07) v5(0.89,75.56) v5(0.89,75.06) v5(0.89,74.55) v5(0.89,74.04) v5(0.89,73.53) v5(0.89,73.03) v5(0.89,72.52) v5(0.89,72.01) v5(0.89,71.5) v5(0.89,70.99) v5(0.89,70.48) v5(0.89,69.98) v5(0.89,69.47) v5(0.89,68.96) v5(0.89,68.45) v5(0.89,67.94) v5(0.89,67.44) v5(0.89,66.93) v5(0.89,66.42) v5(0.89,65.91) v5(0.89,65.41) v5(0.89,64.9) v5(0.89,64.39) v5(0.89,63.88) v5(0.89,63.37) v5(0.89,62.86) v5(0.89,62.36) v5(0.89,61.85) v5(0.89,61.34) v5(0.89,60.83) v5(0.89,60.33) v5(0.89,59.82) v5(0.89,59.31) v5(0.89,58.8) v5(0.89,58.29) v5(0.89,57.78) v5(0.89,57.28) v5(0.89,56.77) v5(0.89,56.26) v5(0.89,55.75) v5(0.89,55.25) v5(0.89,54.74) v5(0.89,54.23) v5(0.89,53.72) v5(0.89,53.21) v5(0.89,52.7) v5(0.89,52.2) v5(0.89,51.69) v5(0.89,51.18) v5(0.89,50.67) v5(0.89,50.17) v5(0.89,49.66) v5(0.89,49.15) v5(0.89,48.64) v5(0.89,48.13) v5(0.89,47.62) v5(0.89,47.12) v5(0.89,46.61) v5(0.89,46.1) v5(0.89,45.59) v5(0.89,45.08) v5(0.89,44.58) v5(0.89,44.07) v5(0.89,43.56) v5(0.89,43.05) v5(0.89,42.55) v5(0.89,42.04) v5(0.89,41.53) v5(0.89,41.02) v5(0.89,40.51) v5(0.89,40) v5(0.89,39.5) v5(0.89,38.99) v5(0.89,38.48) v5(0.89,37.97) v5(0.89,37.47) v5(0.89,36.96) v5(0.89,36.45) v5(0.89,35.94) v5(0.89,35.43) v5(0.89,34.92) v5(0.89,34.42) v5(0.89,33.91) v5(0.89,33.4) v5(0.89,32.89) v5(0.89,32.39) v5(0.89,31.88) v5(0.89,31.37) v5(0.89,30.86) v5(0.89,30.35) v5(0.89,29.84) v5(0.89,29.34) v5(0.89,28.83) v5(0.89,28.32) v5(0.89,27.81) v5(0.89,27.3) v5(0.89,26.8) v5(0.89,26.29) v5(0.89,25.78) v5(0.89,25.27) v5(0.89,24.77) v5(0.89,24.26) v5(0.89,23.75) v5(0.89,23.24) v5(0.89,22.73) v5(0.89,22.23) v5(0.89,21.72) v5(0.89,21.21) v5(0.89,20.7) v5(0.89,20.19) v5(0.89,19.69) v5(0.89,19.18) v5(0.89,18.67) v5(0.89,18.16) v5(0.89,17.65) v5(0.89,17.14) v5(0.89,16.64) v5(0.89,16.13) v5(0.89,15.62) v5(0.89,15.11) v5(0.89,14.61) v5(0.89,14.1) v5(0.89,13.59) v5(0.89,13.08) v5(0.89,12.57) v5(0.89,12.06) v5(0.89,11.56) v5(0.89,11.05) v5(0.89,10.54) v5(0.89,10.03) v5(0.89,9.53) v5(0.89,9.02) v5(0.89,8.51) v5(0.89,8) v5(0.89,7.49) v5(0.89,6.98) v5(0.89,6.48) v5(0.89,5.97) v5(0.89,5.46) v5(0.89,4.95) v5(0.89,4.45) v5(0.89,3.94) v5(0.89,3.43) v5(0.89,2.92) v5(0.89,2.41) v5(0.89,1.9) v5(0.89,1.4) v5(0.89,0.89) v5(1.4,249.3) v5(1.4,0.89) v5(1.9,249.3) v5(1.9,0.89) v5(2.41,249.3) v5(2.41,0.89) v5(2.92,249.3) v5(2.92,0.89) v5(3.43,249.3) v5(3.43,0.89) v5(3.94,249.3) v5(3.94,0.89) v5(4.45,249.3) v5(4.45,0.89) v5(4.95,249.3) v5(4.95,0.89) v5(5.46,249.3) v5(5.46,0.89) v5(5.97,249.3) v5(5.97,0.89) v5(6.48,249.3) v5(6.48,0.89) v5(6.98,249.3) v5(6.98,0.89) v5(7.49,249.3) v5(7.49,0.89) v5(8,249.3) v5(8,0.89) v5(8.51,249.3) v5(8.51,0.89) v5(9.02,249.3) v5(9.02,0.89) v5(9.53,249.3) v5(9.53,0.89) v5(10.03,249.3) v5(10.03,0.89) v5(10.54,249.3) v5(10.54,0.89) v5(11.05,249.3) v5(11.05,0.89) v5(11.56,249.3) v5(11.56,0.89) v5(12.06,249.3) v5(12.06,0.89) v5(12.57,249.3) v5(12.57,0.89) v5(13.08,249.3) v5(13.08,0.89) v5(13.59,249.3) v5(13.59,0.89) v5(14.1,249.3) v5(14.1,0.89) v5(14.61,249.3) v5(14.61,0.89) v5(15.11,249.3) v5(15.11,0.89) v5(15.62,249.3) v5(15.62,0.89) v5(16.13,249.3) v5(16.13,0.89) v5(16.64,249.3) v5(16.64,0.89) v5(17.14,249.3) v5(17.14,0.89) v5(17.65,249.3) v5(17.65,0.89) v5(18.16,249.3) v5(18.16,0.89) v5(18.67,249.3) v5(18.67,0.89) v5(19.18,249.3) v5(19.18,0.89) v5(19.69,249.3) v5(19.69,0.89) v5(20.19,249.3) v5(20.19,0.89) v5(20.7,249.3) v5(20.7,0.89) v5(21.21,249.3) v5(21.21,0.89) v5(21.72,249.3) v5(21.72,0.89) v5(22.23,249.3) v5(22.23,0.89) v5(22.73,249.3) v5(22.73,0.89) v5(23.24,249.3) v5(23.24,0.89) v5(23.75,249.3) v5(23.75,0.89) v5(24.26,249.3) v5(24.26,0.89) v5(24.77,249.3) v5(24.77,0.89) v5(25.27,249.3) v5(25.27,0.89) v5(25.78,249.3) v5(25.78,0.89) v5(26.29,249.3) v5(26.29,0.89) v5(26.8,249.3) v5(26.8,0.89) v5(27.3,249.3) v5(27.3,0.89) v5(27.81,249.3) v5(27.81,0.89) v5(28.32,249.3) v5(28.32,0.89) v5(28.83,249.3) v5(28.83,0.89) v5(29.34,249.3) v5(29.34,0.89) v5(29.84,249.3) v5(29.84,0.89) v5(30.35,249.3) v5(30.35,0.89) v5(30.86,249.3) v5(30.86,0.89) v5(31.37,249.3) v5(31.37,0.89) v5(31.88,249.3) v5(31.88,0.89) v5(32.39,249.3) v5(32.39,0.89) v5(32.89,249.3) v5(32.89,0.89) v5(33.4,249.3) v5(33.4,0.89) v5(33.91,249.3) v5(33.91,0.89) v5(34.42,249.3) v5(34.42,0.89) v5(34.92,249.3) v5(34.92,0.89) v5(35.43,249.3) v5(35.43,0.89) v5(35.94,249.3) v5(35.94,0.89) v5(36.45,249.3) v5(36.45,0.89) v5(36.96,249.3) v5(36.96,0.89) v5(37.47,249.3) v5(37.47,0.89) v5(37.97,249.3) v5(37.97,0.89) v5(38.48,249.3) v5(38.48,0.89) v5(38.99,249.3) v5(38.99,0.89) v5(39.5,249.3) v5(39.5,0.89) v5(40,249.3) v5(40,0.89) v5(40.51,249.3) v5(40.51,0.89) v5(41.02,249.3) v5(41.02,0.89) v5(41.53,249.3) v5(41.53,0.89) v5(42.04,249.3) v5(42.04,0.89) v5(42.55,249.3) v5(42.55,0.89) v5(43.05,249.3) v5(43.05,0.89) v5(43.56,249.3) v5(43.56,0.89) v5(44.07,249.3) v5(44.07,0.89) v5(44.58,249.3) v5(44.58,0.89) v5(45.08,249.3) v5(45.08,0.89) v5(45.59,249.3) v5(45.59,0.89) v5(46.1,249.3) v5(46.1,0.89) v5(46.61,249.3) v5(46.61,0.89) v5(47.12,249.3) v5(47.12,0.89) v5(47.62,249.3) v5(47.62,0.89) v5(48.13,249.3) v5(48.13,0.89) v5(48.64,249.3) v5(48.64,0.89) v5(49.15,249.3) v5(49.15,0.89) v5(49.66,249.3) v5(49.66,0.89) v5(50.17,249.3) v5(50.17,0.89) v5(50.67,249.3) v5(50.67,0.89) v5(51.18,249.3) v5(51.18,0.89) v5(51.69,249.3) v5(51.69,0.89) v5(52.2,249.3) v5(52.2,0.89) v5(52.7,249.3) v5(52.7,0.89) v5(53.21,249.3) v5(53.21,0.89) v5(53.72,249.3) v5(53.72,0.89) v5(54.23,249.3) v5(54.23,0.89) v5(54.74,249.3) v5(54.74,0.89) v5(55.25,249.3) v5(55.25,0.89) v5(55.75,249.3) v5(55.75,0.89) v5(56.26,249.3) v5(56.26,0.89) v5(56.77,249.3) v5(56.77,0.89) v5(57.28,249.3) v5(57.28,0.89) v5(57.78,249.3) v5(57.78,0.89) v5(58.29,249.3) v5(58.29,0.89) v5(58.8,249.3) v5(58.8,0.89) v5(59.31,249.3) v5(59.31,0.89) v5(59.82,249.3) v5(59.82,0.89) v5(60.33,249.3) v5(60.33,0.89) v5(60.83,249.3) v5(60.83,0.89) v5(61.34,249.3) v5(61.34,0.89) v5(61.85,249.3) v5(61.85,0.89) v5(62.36,249.3) v5(62.36,0.89) v5(62.86,249.3) v5(62.86,0.89) v5(63.37,249.3) v5(63.37,0.89) v5(63.88,249.3) v5(63.88,0.89) v5(64.39,249.3) v5(64.39,0.89) v5(64.9,249.3) v5(64.9,0.89) v5(65.41,249.3) v5(65.41,0.89) v5(65.91,249.3) v5(65.91,0.89) v5(66.42,249.3) v5(66.42,248.79) v5(66.42,248.28) v5(66.42,247.78) v5(66.42,247.27) v5(66.42,246.76) v5(66.42,246.25) v5(66.42,245.75) v5(66.42,245.24) v5(66.42,244.73) v5(66.42,244.22) v5(66.42,243.71) v5(66.42,243.21) v5(66.42,242.7) v5(66.42,242.19) v5(66.42,241.68) v5(66.42,241.17) v5(66.42,240.66) v5(66.42,240.16) v5(66.42,239.65) v5(66.42,239.14) v5(66.42,238.63) v5(66.42,238.12) v5(66.42,237.62) v5(66.42,237.11) v5(66.42,236.6) v5(66.42,236.09) v5(66.42,235.59) v5(66.42,235.08) v5(66.42,234.57) v5(66.42,234.06) v5(66.42,233.55) v5(66.42,233.05) v5(66.42,232.54) v5(66.42,232.03) v5(66.42,231.52) v5(66.42,231.01) v5(66.42,230.5) v5(66.42,230) v5(66.42,229.49) v5(66.42,228.98) v5(66.42,228.47) v5(66.42,227.97) v5(66.42,227.46) v5(66.42,226.95) v5(66.42,226.44) v5(66.42,225.93) v5(66.42,225.43) v5(66.42,224.92) v5(66.42,224.41) v5(66.42,223.9) v5(66.42,223.39) v5(66.42,222.88) v5(66.42,222.38) v5(66.42,221.87) v5(66.42,221.36) v5(66.42,220.85) v5(66.42,220.34) v5(66.42,219.84) v5(66.42,219.33) v5(66.42,218.82) v5(66.42,218.31) v5(66.42,217.81) v5(66.42,217.3) v5(66.42,216.79) v5(66.42,216.28) v5(66.42,215.77) v5(66.42,215.27) v5(66.42,214.76) v5(66.42,214.25) v5(66.42,213.74) v5(66.42,213.23) v5(66.42,212.72) v5(66.42,212.22) v5(66.42,211.71) v5(66.42,211.2) v5(66.42,210.69) v5(66.42,210.19) v5(66.42,209.68) v5(66.42,209.17) v5(66.42,208.66) v5(66.42,208.15) v5(66.42,207.65) v5(66.42,207.14) v5(66.42,206.63) v5(66.42,206.12) v5(66.42,205.61) v5(66.42,205.1) v5(66.42,204.6) v5(66.42,204.09) v5(66.42,203.58) v5(66.42,203.07) v5(66.42,202.56) v5(66.42,202.06) v5(66.42,201.55) v5(66.42,201.04) v5(66.42,200.53) v5(66.42,200.03) v5(66.42,199.52) v5(66.42,199.01) v5(66.42,198.5) v5(66.42,197.99) v5(66.42,197.49) v5(66.42,196.98) v5(66.42,196.47) v5(66.42,195.96) v5(66.42,195.45) v5(66.42,194.94) v5(66.42,194.44) v5(66.42,193.93) v5(66.42,193.42) v5(66.42,192.91) v5(66.42,192.41) v5(66.42,191.9) v5(66.42,191.39) v5(66.42,190.88) v5(66.42,190.37) v5(66.42,189.87) v5(66.42,189.36) v5(66.42,188.85) v5(66.42,188.34) v5(66.42,187.83) v5(66.42,187.33) v5(66.42,186.82) v5(66.42,186.31) v5(66.42,185.8) v5(66.42,185.29) v5(66.42,184.78) v5(66.42,184.28) v5(66.42,183.77) v5(66.42,183.26) v5(66.42,182.75) v5(66.42,182.25) v5(66.42,181.74) v5(66.42,181.23) v5(66.42,180.72) v5(66.42,180.21) v5(66.42,179.71) v5(66.42,179.2) v5(66.42,178.69) v5(66.42,178.18) v5(66.42,177.67) v5(66.42,177.16) v5(66.42,176.66) v5(66.42,176.15) v5(66.42,175.64) v5(66.42,175.13) v5(66.42,174.62) v5(66.42,174.12) v5(66.42,173.61) v5(66.42,173.1) v5(66.42,172.59) v5(66.42,172.09) v5(66.42,171.58) v5(66.42,171.07) v5(66.42,170.56) v5(66.42,170.05) v5(66.42,169.55) v5(66.42,169.04) v5(66.42,168.53) v5(66.42,168.02) v5(66.42,167.51) v5(66.42,167) v5(66.42,166.5) v5(66.42,165.99) v5(66.42,165.48) v5(66.42,164.97) v5(66.42,164.47) v5(66.42,163.96) v5(66.42,163.45) v5(66.42,162.94) v5(66.42,162.43) v5(66.42,161.93) v5(66.42,161.42) v5(66.42,160.91) v5(66.42,160.4) v5(66.42,159.89) v5(66.42,159.38) v5(66.42,158.88) v5(66.42,158.37) v5(66.42,157.86) v5(66.42,157.35) v5(66.42,156.84) v5(66.42,156.34) v5(66.42,155.83) v5(66.42,155.32) v5(66.42,154.81) v5(66.42,154.31) v5(66.42,153.8) v5(66.42,153.29) v5(66.42,152.78) v5(66.42,152.27) v5(66.42,151.77) v5(66.42,151.26) v5(66.42,150.75) v5(66.42,150.24) v5(66.42,149.73) v5(66.42,149.22) v5(66.42,148.72) v5(66.42,148.21) v5(66.42,147.7) v5(66.42,147.19) v5(66.42,146.69) v5(66.42,146.18) v5(66.42,145.67) v5(66.42,145.16) v5(66.42,144.65) v5(66.42,144.15) v5(66.42,143.64) v5(66.42,143.13) v5(66.42,142.62) v5(66.42,142.11) v5(66.42,141.6) v5(66.42,141.1) v5(66.42,140.59) v5(66.42,140.08) v5(66.42,139.57) v5(66.42,139.06) v5(66.42,138.56) v5(66.42,138.05) v5(66.42,137.54) v5(66.42,137.03) v5(66.42,136.53) v5(66.42,136.02) v5(66.42,135.51) v5(66.42,135) v5(66.42,134.49) v5(66.42,133.99) v5(66.42,133.48) v5(66.42,132.97) v5(66.42,132.46) v5(66.42,131.95) v5(66.42,131.44) v5(66.42,130.94) v5(66.42,130.43) v5(66.42,129.92) v5(66.42,129.41) v5(66.42,128.91) v5(66.42,128.4) v5(66.42,127.89) v5(66.42,127.38) v5(66.42,126.87) v5(66.42,126.37) v5(66.42,125.86) v5(66.42,125.35) v5(66.42,124.84) v5(66.42,124.33) v5(66.42,123.83) v5(66.42,123.32) v5(66.42,122.81) v5(66.42,122.3) v5(66.42,121.79) v5(66.42,121.28) v5(66.42,120.78) v5(66.42,120.27) v5(66.42,119.76) v5(66.42,119.25) v5(66.42,118.75) v5(66.42,118.24) v5(66.42,117.73) v5(66.42,117.22) v5(66.42,116.71) v5(66.42,116.2) v5(66.42,115.7) v5(66.42,115.19) v5(66.42,114.68) v5(66.42,114.17) v5(66.42,113.67) v5(66.42,113.16) v5(66.42,112.65) v5(66.42,112.14) v5(66.42,111.63) v5(66.42,111.12) v5(66.42,110.62) v5(66.42,110.11) v5(66.42,109.6) v5(66.42,109.09) v5(66.42,108.59) v5(66.42,108.08) v5(66.42,107.57) v5(66.42,107.06) v5(66.42,106.55) v5(66.42,106.05) v5(66.42,105.54) v5(66.42,105.03) v5(66.42,104.52) v5(66.42,104.01) v5(66.42,103.51) v5(66.42,103) v5(66.42,102.49) v5(66.42,101.98) v5(66.42,101.47) v5(66.42,100.97) v5(66.42,100.46) v5(66.42,99.95) v5(66.42,99.44) v5(66.42,98.93) v5(66.42,98.42) v5(66.42,97.92) v5(66.42,97.41) v5(66.42,96.9) v5(66.42,96.39) v5(66.42,95.89) v5(66.42,95.38) v5(66.42,94.87) v5(66.42,94.36) v5(66.42,93.85) v5(66.42,93.34) v5(66.42,92.84) v5(66.42,92.33) v5(66.42,91.82) v5(66.42,91.31) v5(66.42,90.81) v5(66.42,90.3) v5(66.42,89.79) v5(66.42,89.28) v5(66.42,88.77) v5(66.42,88.27) v5(66.42,87.76) v5(66.42,87.25) v5(66.42,86.74) v5(66.42,86.23) v5(66.42,85.73) v5(66.42,85.22) v5(66.42,84.71) v5(66.42,84.2) v5(66.42,83.69) v5(66.42,83.19) v5(66.42,82.68) v5(66.42,82.17) v5(66.42,81.66) v5(66.42,81.15) v5(66.42,80.65) v5(66.42,80.14) v5(66.42,79.63) v5(66.42,79.12) v5(66.42,78.61) v5(66.42,78.11) v5(66.42,77.6) v5(66.42,77.09) v5(66.42,76.58) v5(66.42,76.07) v5(66.42,75.56) v5(66.42,75.06) v5(66.42,74.55) v5(66.42,74.04) v5(66.42,73.53) v5(66.42,73.03) v5(66.42,72.52) v5(66.42,72.01) v5(66.42,71.5) v5(66.42,70.99) v5(66.42,70.48) v5(66.42,69.98) v5(66.42,69.47) v5(66.42,68.96) v5(66.42,68.45) v5(66.42,67.94) v5(66.42,67.44) v5(66.42,66.93) v5(66.42,66.42) v5(66.42,65.91) v5(66.42,65.41) v5(66.42,64.9) v5(66.42,64.39) v5(66.42,63.88) v5(66.42,63.37) v5(66.42,62.86) v5(66.42,62.36) v5(66.42,61.85) v5(66.42,61.34) v5(66.42,60.83) v5(66.42,60.33) v5(66.42,59.82) v5(66.42,59.31) v5(66.42,58.8) v5(66.42,58.29) v5(66.42,57.78) v5(66.42,57.28) v5(66.42,56.77) v5(66.42,56.26) v5(66.42,55.75) v5(66.42,55.25) v5(66.42,54.74) v5(66.42,54.23) v5(66.42,53.72) v5(66.42,53.21) v5(66.42,52.7) v5(66.42,52.2) v5(66.42,51.69) v5(66.42,51.18) v5(66.42,50.67) v5(66.42,50.17) v5(66.42,49.66) v5(66.42,49.15) v5(66.42,48.64) v5(66.42,48.13) v5(66.42,47.62) v5(66.42,47.12) v5(66.42,46.61) v5(66.42,46.1) v5(66.42,45.59) v5(66.42,45.08) v5(66.42,44.58) v5(66.42,44.07) v5(66.42,43.56) v5(66.42,43.05) v5(66.42,42.55) v5(66.42,42.04) v5(66.42,41.53) v5(66.42,41.02) v5(66.42,40.51) v5(66.42,40) v5(66.42,39.5) v5(66.42,38.99) v5(66.42,38.48) v5(66.42,37.97) v5(66.42,37.47) v5(66.42,36.96) v5(66.42,36.45) v5(66.42,35.94) v5(66.42,35.43) v5(66.42,34.92) v5(66.42,34.42) v5(66.42,33.91) v5(66.42,33.4) v5(66.42,32.89) v5(66.42,32.39) v5(66.42,31.88) v5(66.42,31.37) v5(66.42,30.86) v5(66.42,30.35) v5(66.42,29.84) v5(66.42,29.34) v5(66.42,28.83) v5(66.42,28.32) v5(66.42,27.81) v5(66.42,27.3) v5(66.42,26.8) v5(66.42,26.29) v5(66.42,25.78) v5(66.42,25.27) v5(66.42,24.77) v5(66.42,24.26) v5(66.42,23.75) v5(66.42,23.24) v5(66.42,22.73) v5(66.42,22.23) v5(66.42,21.72) v5(66.42,21.21) v5(66.42,20.7) v5(66.42,20.19) v5(66.42,19.69) v5(66.42,19.18) v5(66.42,18.67) v5(66.42,18.16) v5(66.42,17.65) v5(66.42,17.14) v5(66.42,16.64) v5(66.42,16.13) v5(66.42,15.62) v5(66.42,15.11) v5(66.42,14.61) v5(66.42,14.1) v5(66.42,13.59) v5(66.42,13.08) v5(66.42,12.57) v5(66.42,12.06) v5(66.42,11.56) v5(66.42,11.05) v5(66.42,10.54) v5(66.42,10.03) v5(66.42,9.53) v5(66.42,9.02) v5(66.42,8.51) v5(66.42,8) v5(66.42,7.49) v5(66.42,6.98) v5(66.42,6.48) v5(66.42,5.97) v5(66.42,5.46) v5(66.42,4.95) v5(66.42,4.45) v5(66.42,3.94) v5(66.42,3.43) v5(66.42,2.92) v5(66.42,2.41) v5(66.42,1.9) v5(66.42,1.4) v5(66.42,0.89) v6(16.76,134.44) v6(16.76,131.94) v6(16.76,129.44) v6(16.76,126.94) v6(16.76,124.44) v6(16.76,121.94) v6(16.76,119.44) v6(16.76,116.94) v6(16.96,134.93) v6(16.96,131.46) v6(16.96,129.93) v6(16.96,126.46) v6(16.96,124.93) v6(16.96,121.46) v6(16.96,119.93) v6(16.96,116.46) v6(17.44,135.13) v6(17.44,133.76) v6(17.44,132.63) v6(17.44,131.26) v6(17.44,130.13) v6(17.44,128.76) v6(17.44,127.63) v6(17.44,126.26) v6(17.44,125.13) v6(17.44,123.76) v6(17.44,122.63) v6(17.44,121.26) v6(17.44,120.13) v6(17.44,118.76) v6(17.44,117.63) v6(17.44,116.26) v6(17.93,134.93) v6(17.93,133.96) v6(17.93,132.43) v6(17.93,131.46) v6(17.93,129.93) v6(17.93,128.96) v6(17.93,127.43) v6(17.93,126.46) v6(17.93,124.93) v6(17.93,123.96) v6(17.93,122.43) v6(17.93,121.46) v6(17.93,119.93) v6(17.93,118.96) v6(17.93,117.43) v6(17.93,116.46) v6(18.13,134.44) v6(18.13,131.94) v6(18.13,129.44) v6(18.13,126.94) v6(18.13,124.44) v6(18.13,121.94) v6(18.13,119.44) v6(18.13,116.94)
